# Altium PCB S7CAS-PLEIADES-CARTE-MERE_P01.PcbDoc (part 1 of 9)
Units mil, origin at the board's own origin, x right, y up, seen from the top; angles counter-clockwise.
Board outline 6153 x 3696 mil, 16 copper layers (Top, Ground Plane 1, Signal Layer 1, Ground Plane 2, Signal Layer 2, Ground Plane 3, Power Plane, Ground Plane 4, Ground Plane 5, Power Plane 2, Ground Plane 6, Signal Layer 3, Ground Plane 7, Signal Layer 4, Ground Plane 8, Bottom), stack 75.282 mil thick; 430 components, 328 nets, 2174 pads, 2158 vias.
Unrouted connection lines stored in the file: 202.
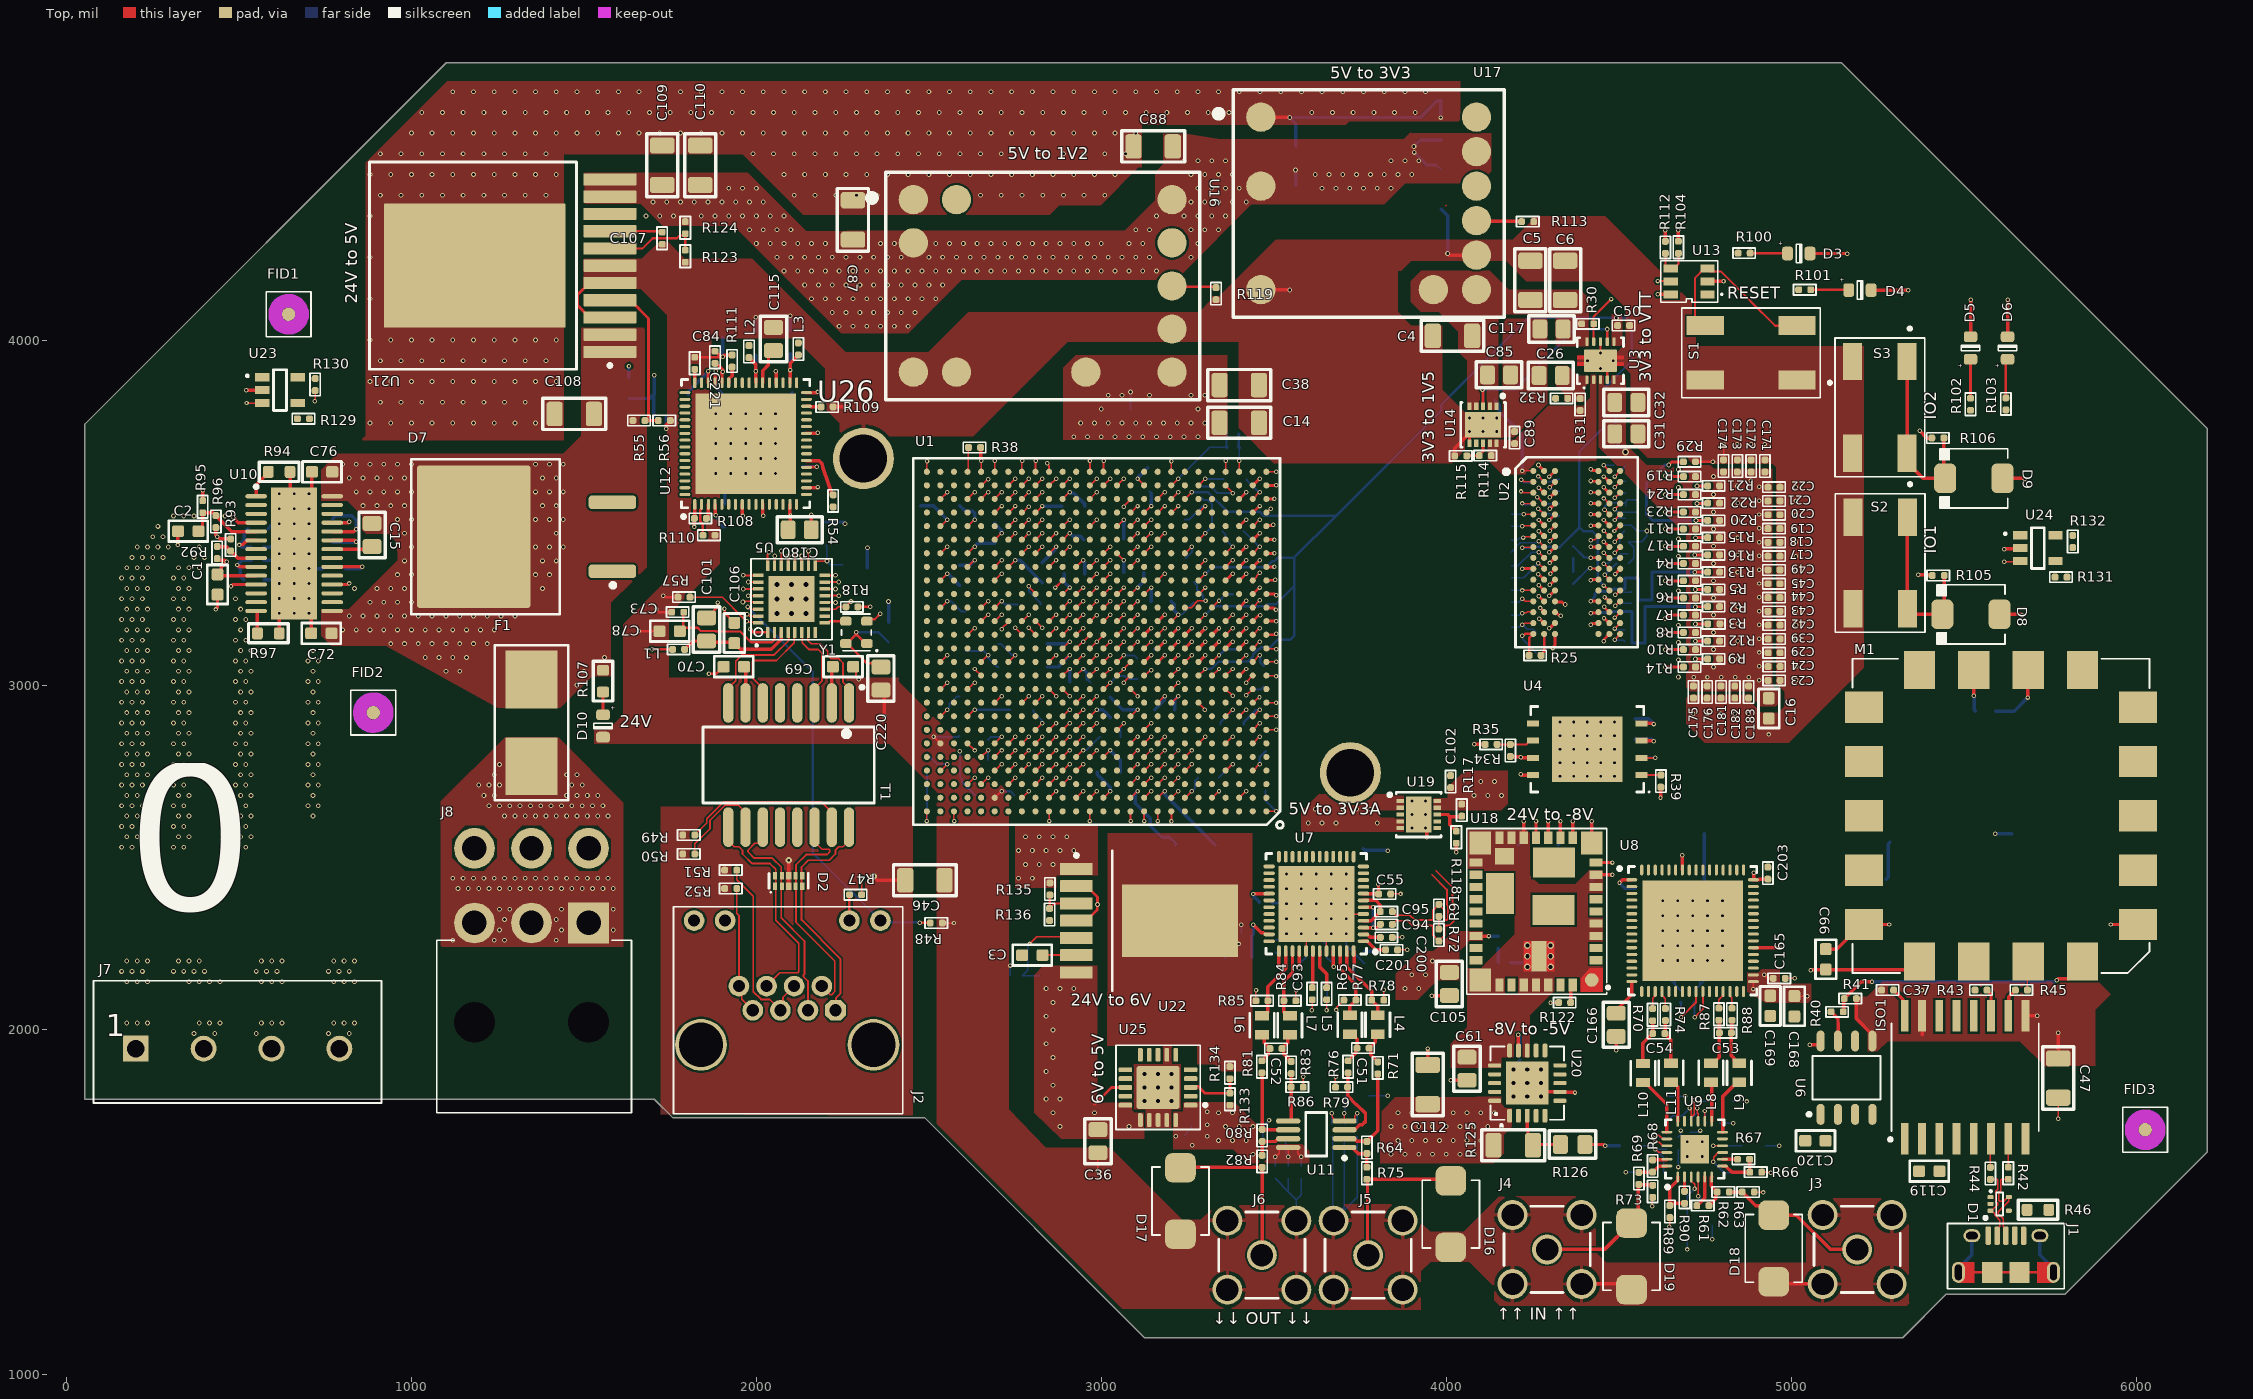
[diagram p0: Top view]
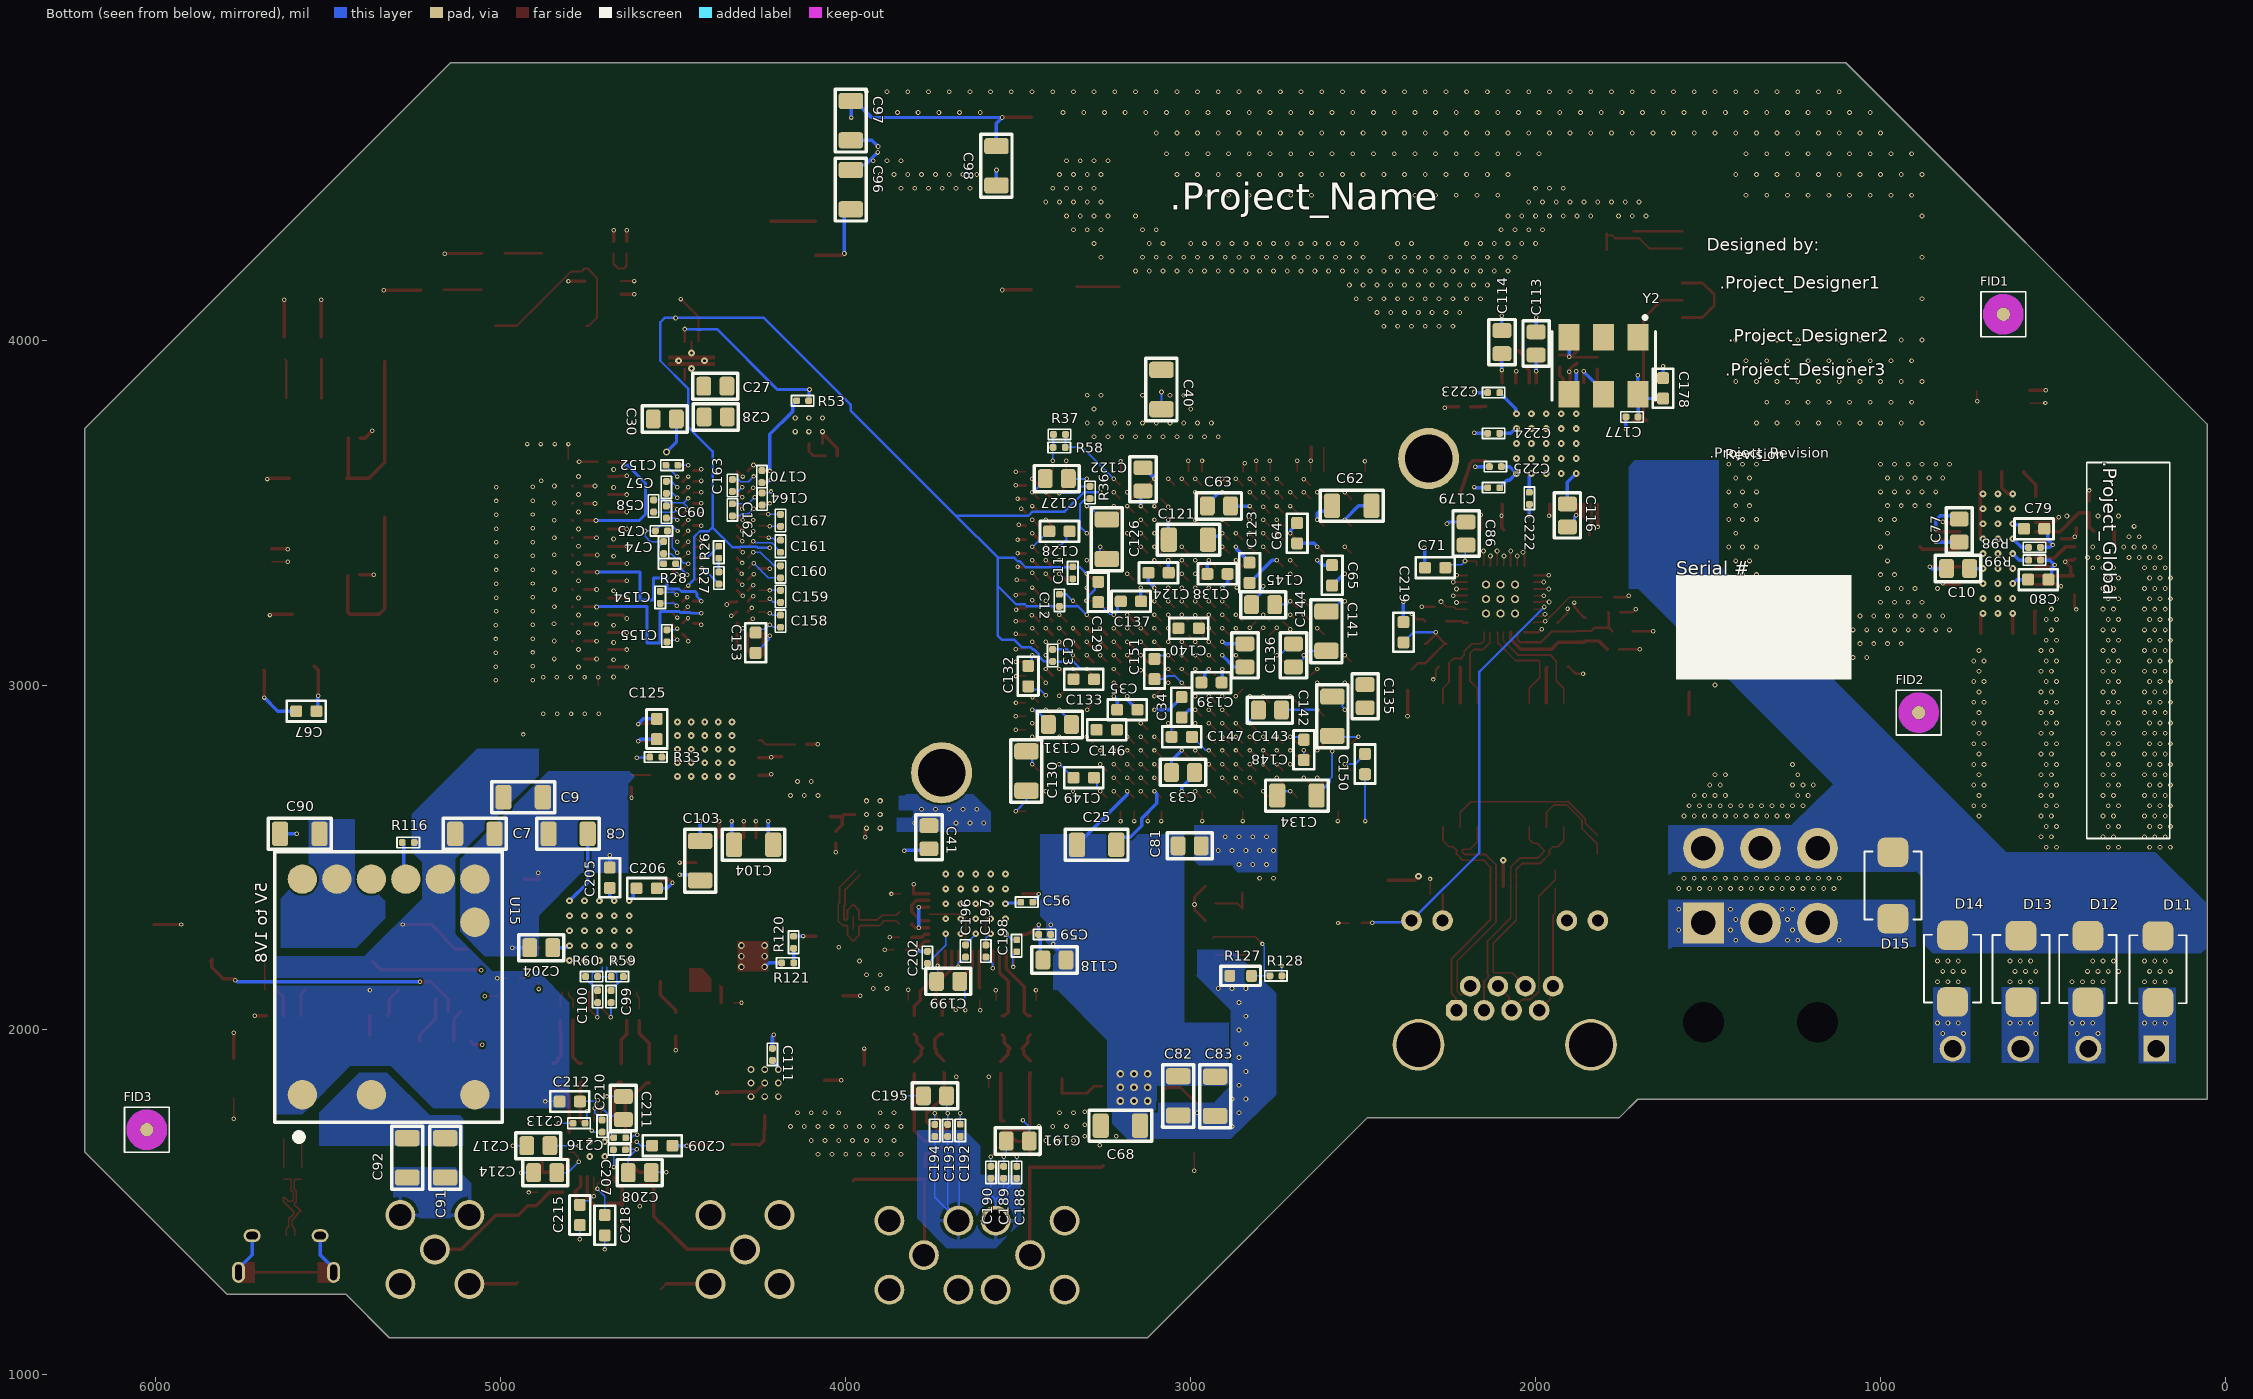
[diagram p1: Bottom view, seen from below]
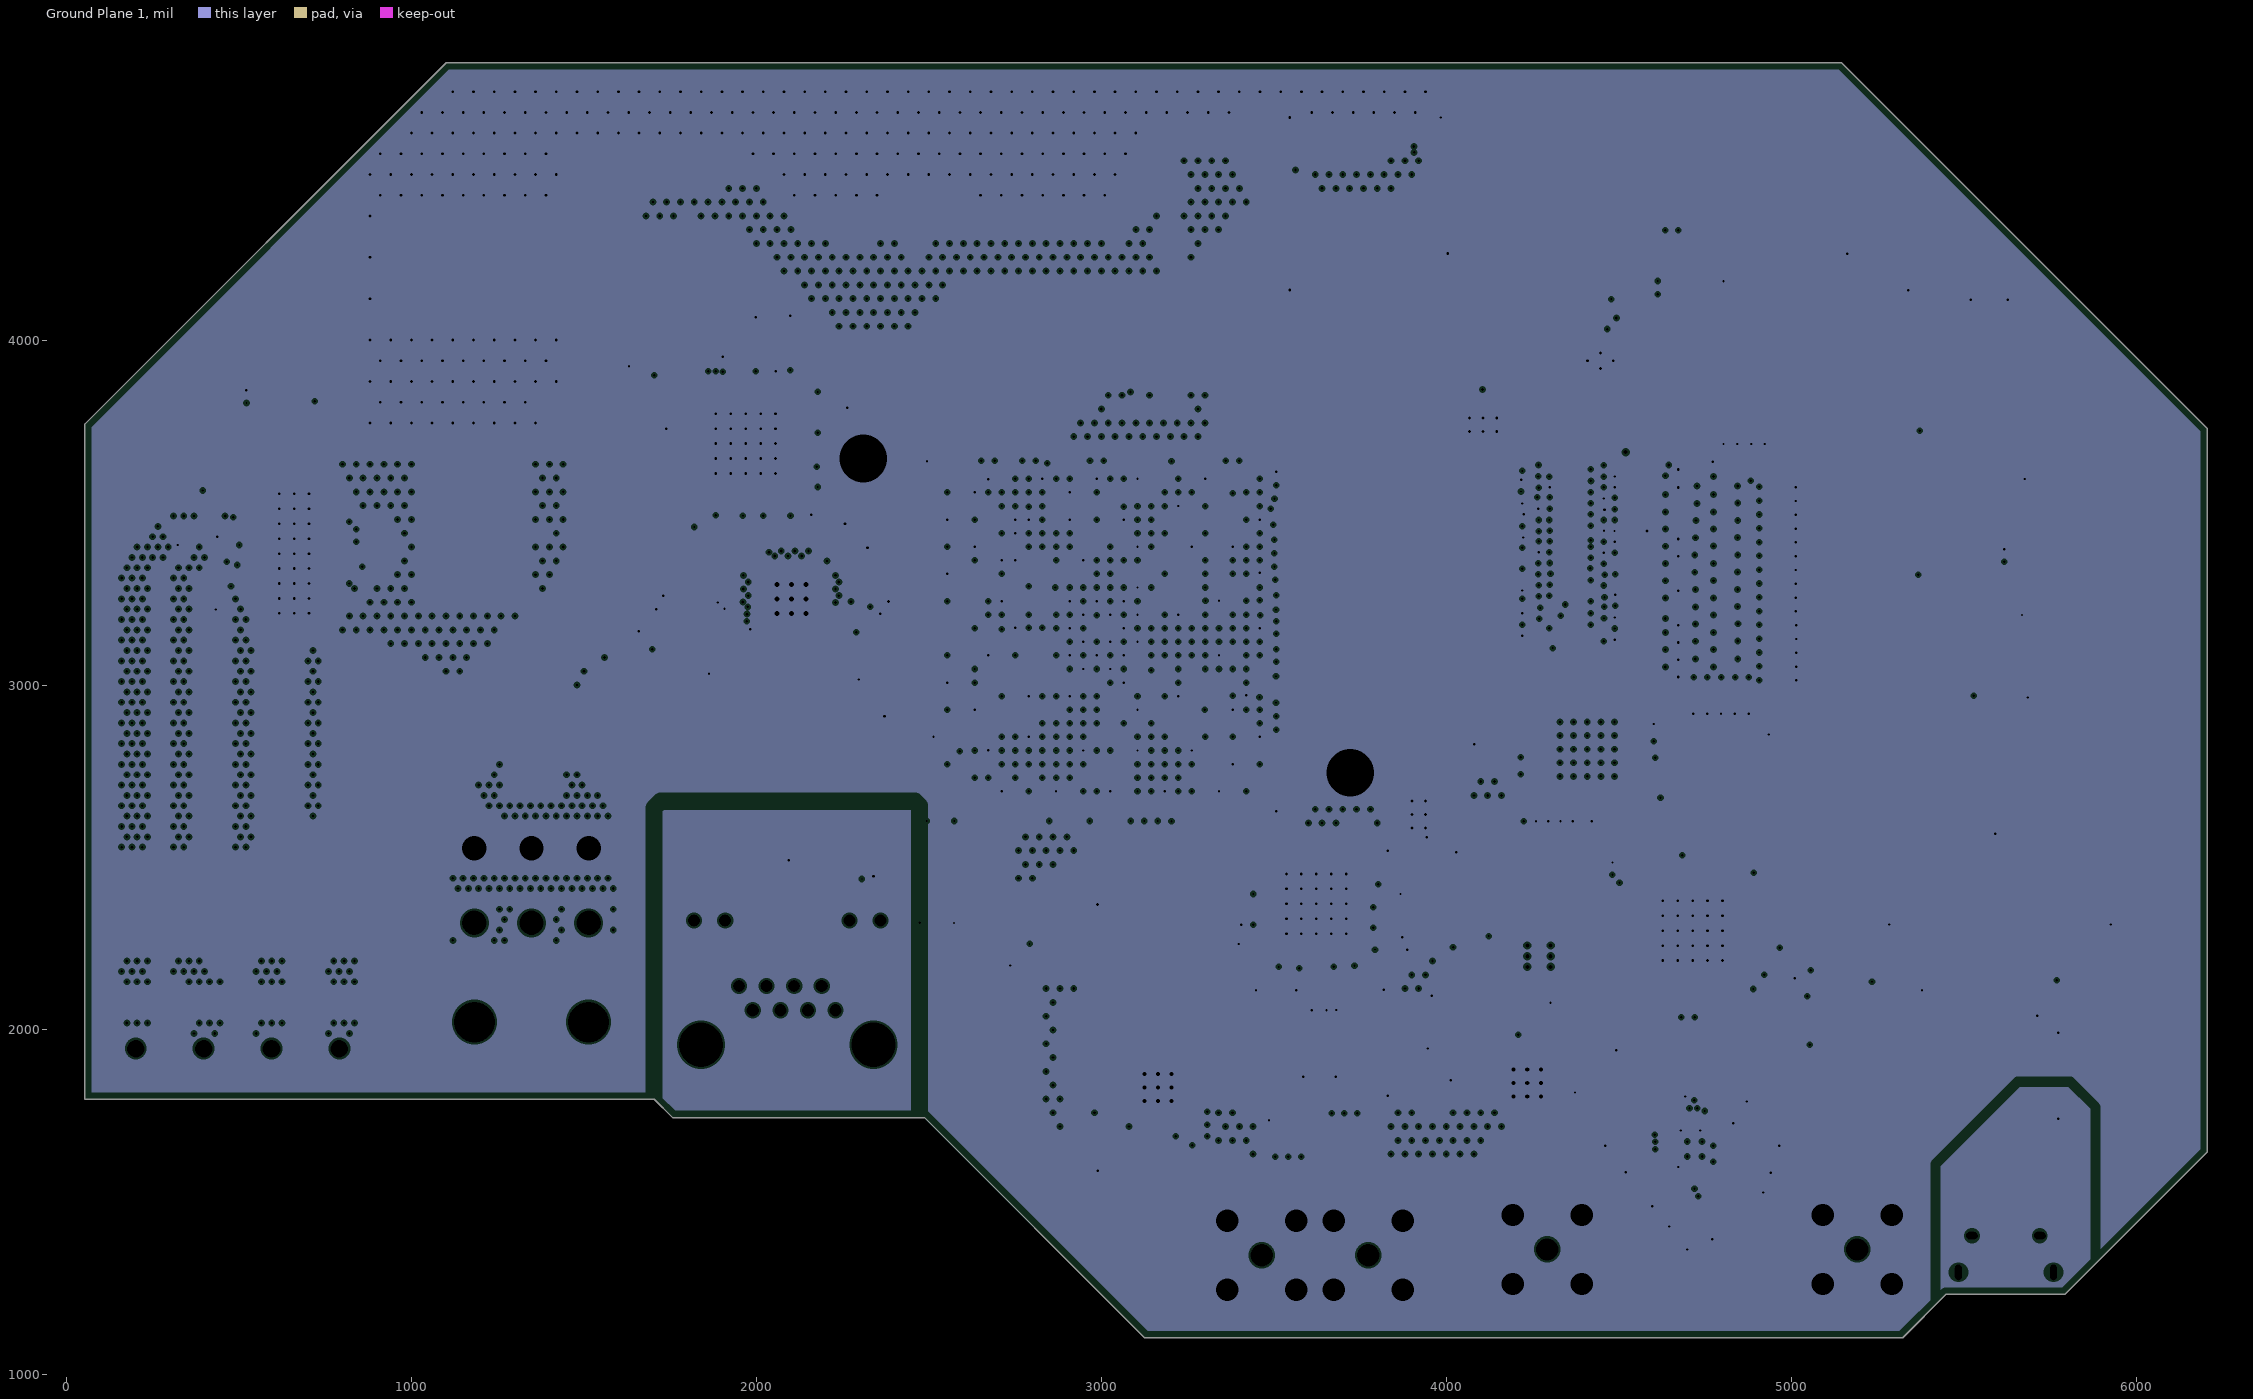
[diagram p2: Ground Plane 1, clearances drawn from the general rule]
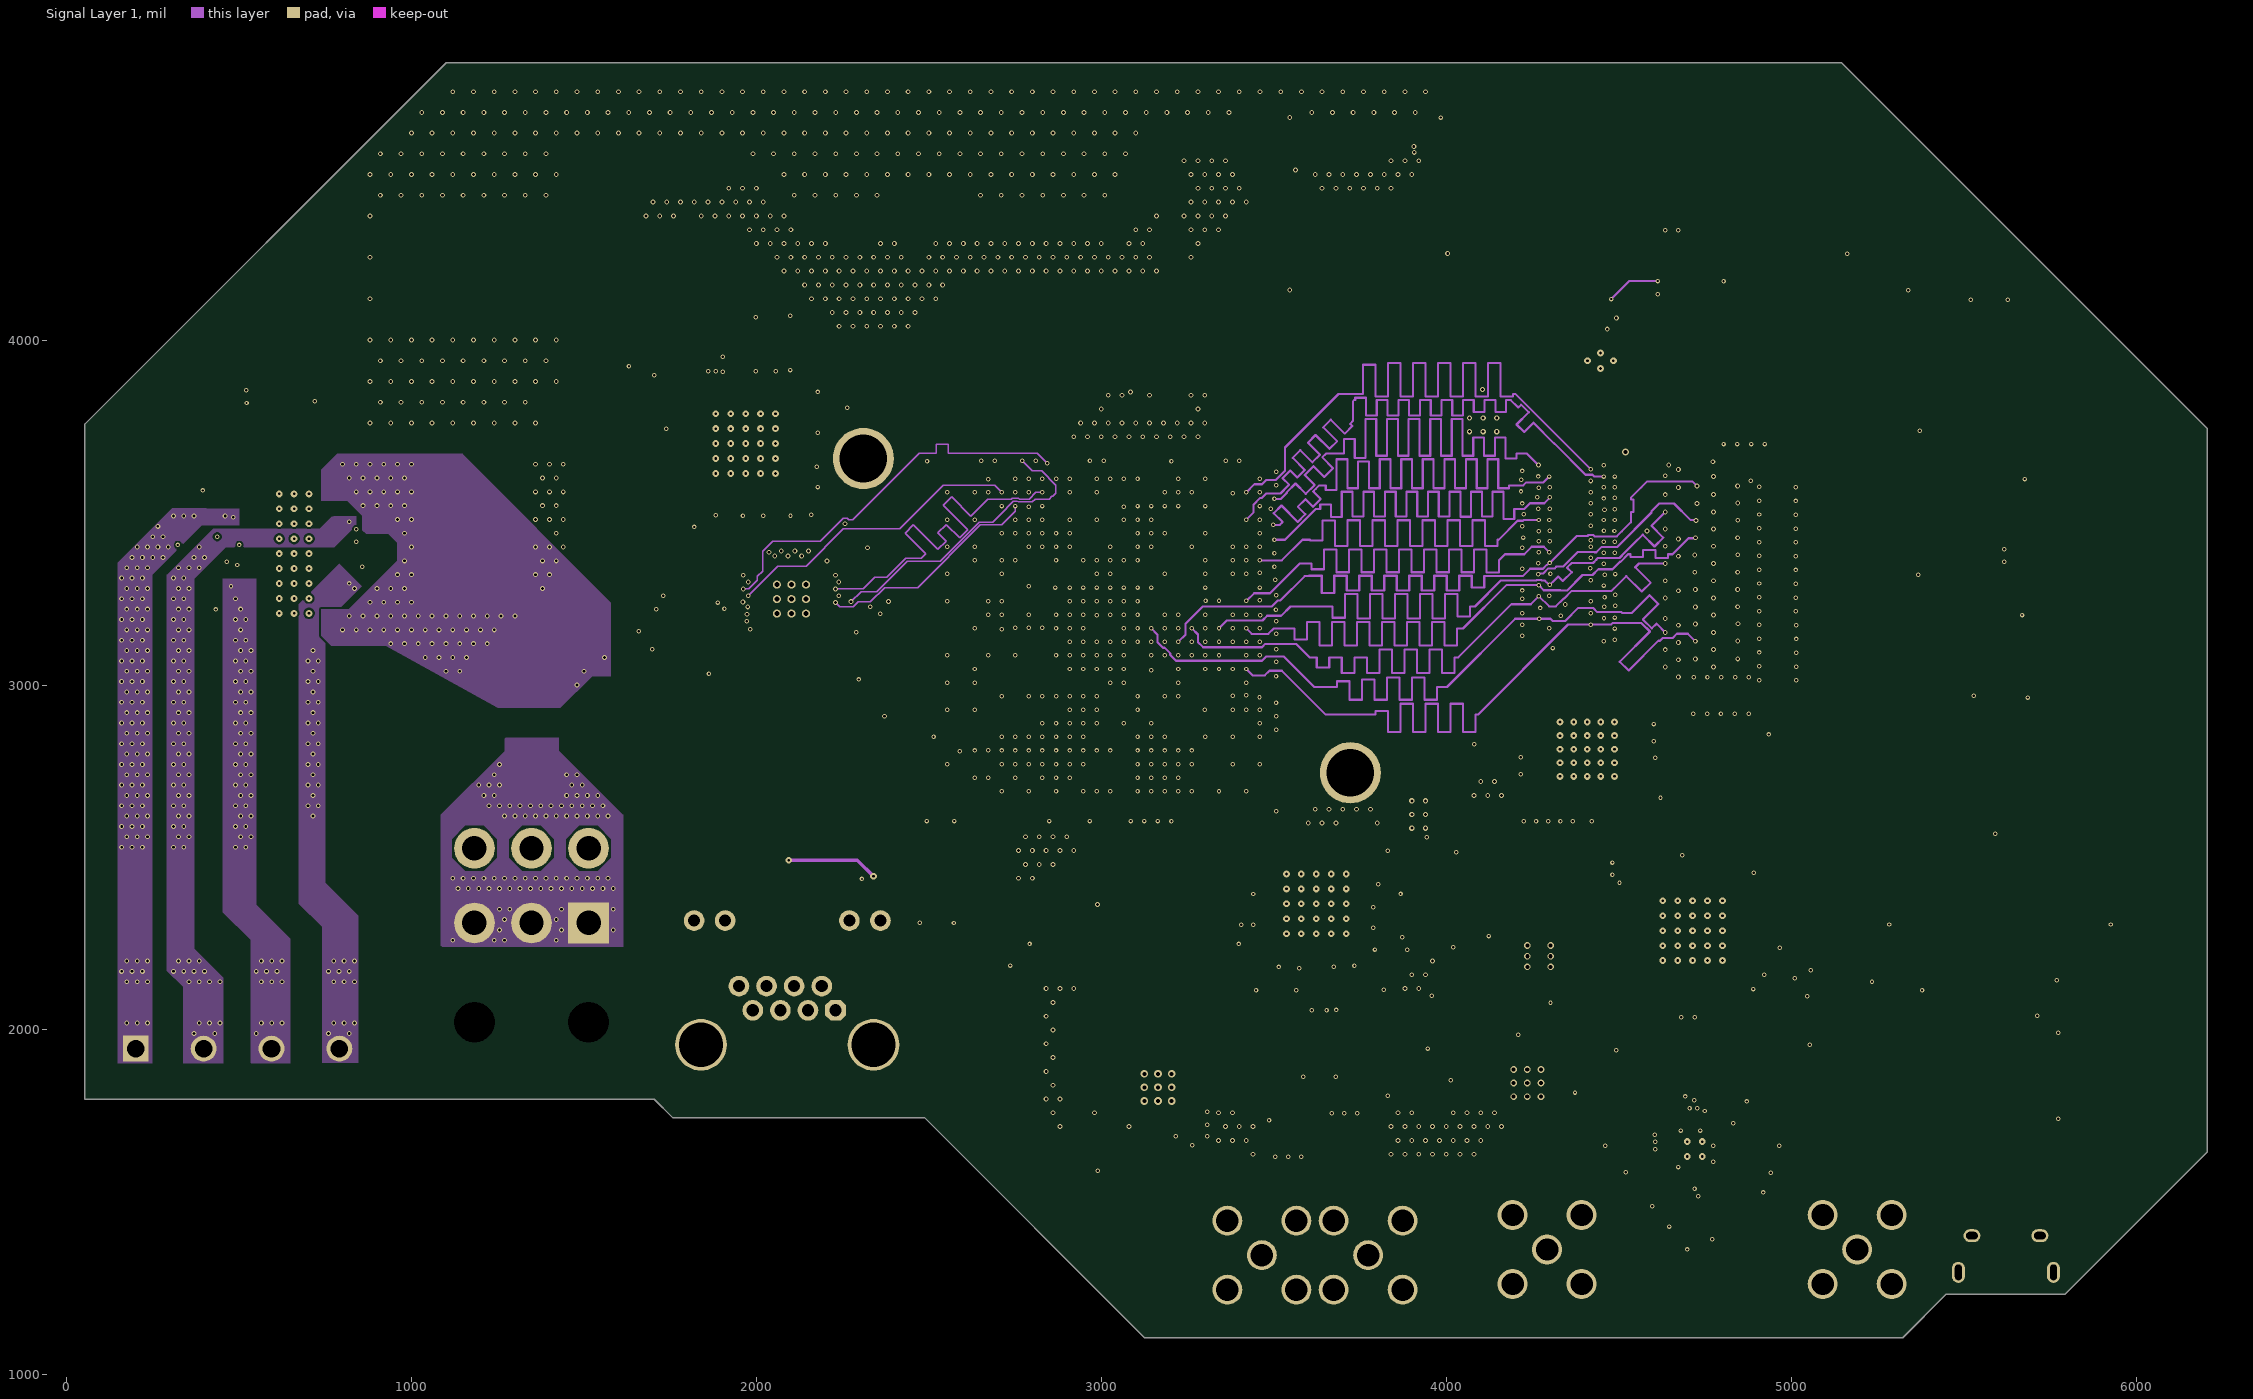
[diagram p3: Signal Layer 1]
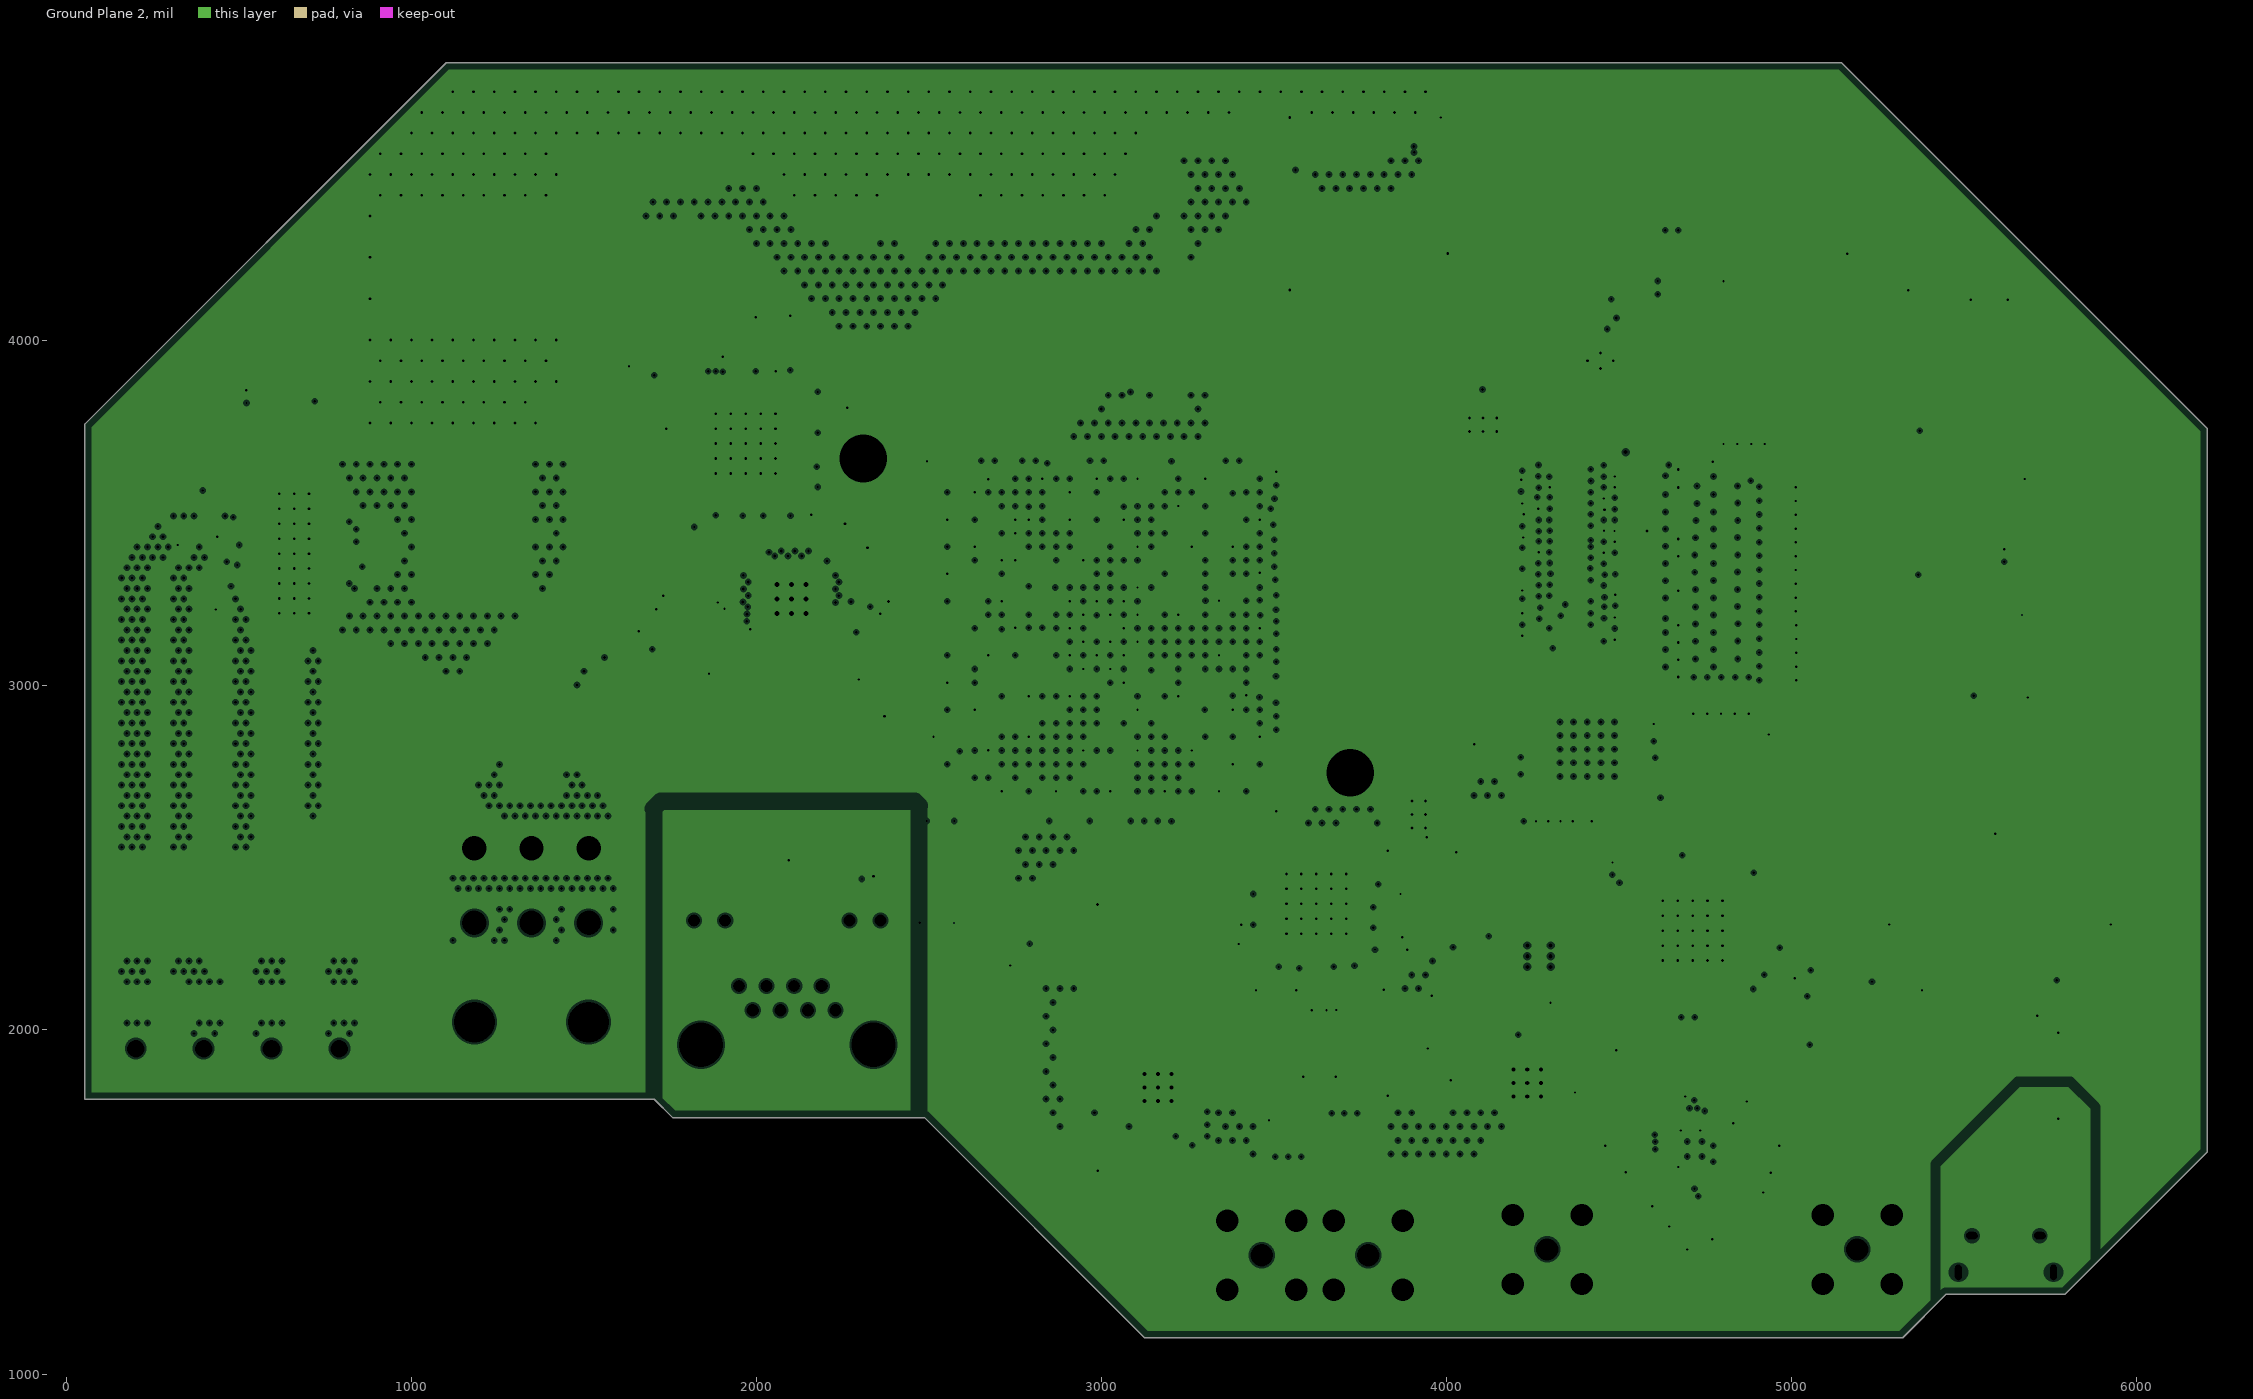
[diagram p4: Ground Plane 2, clearances drawn from the general rule]
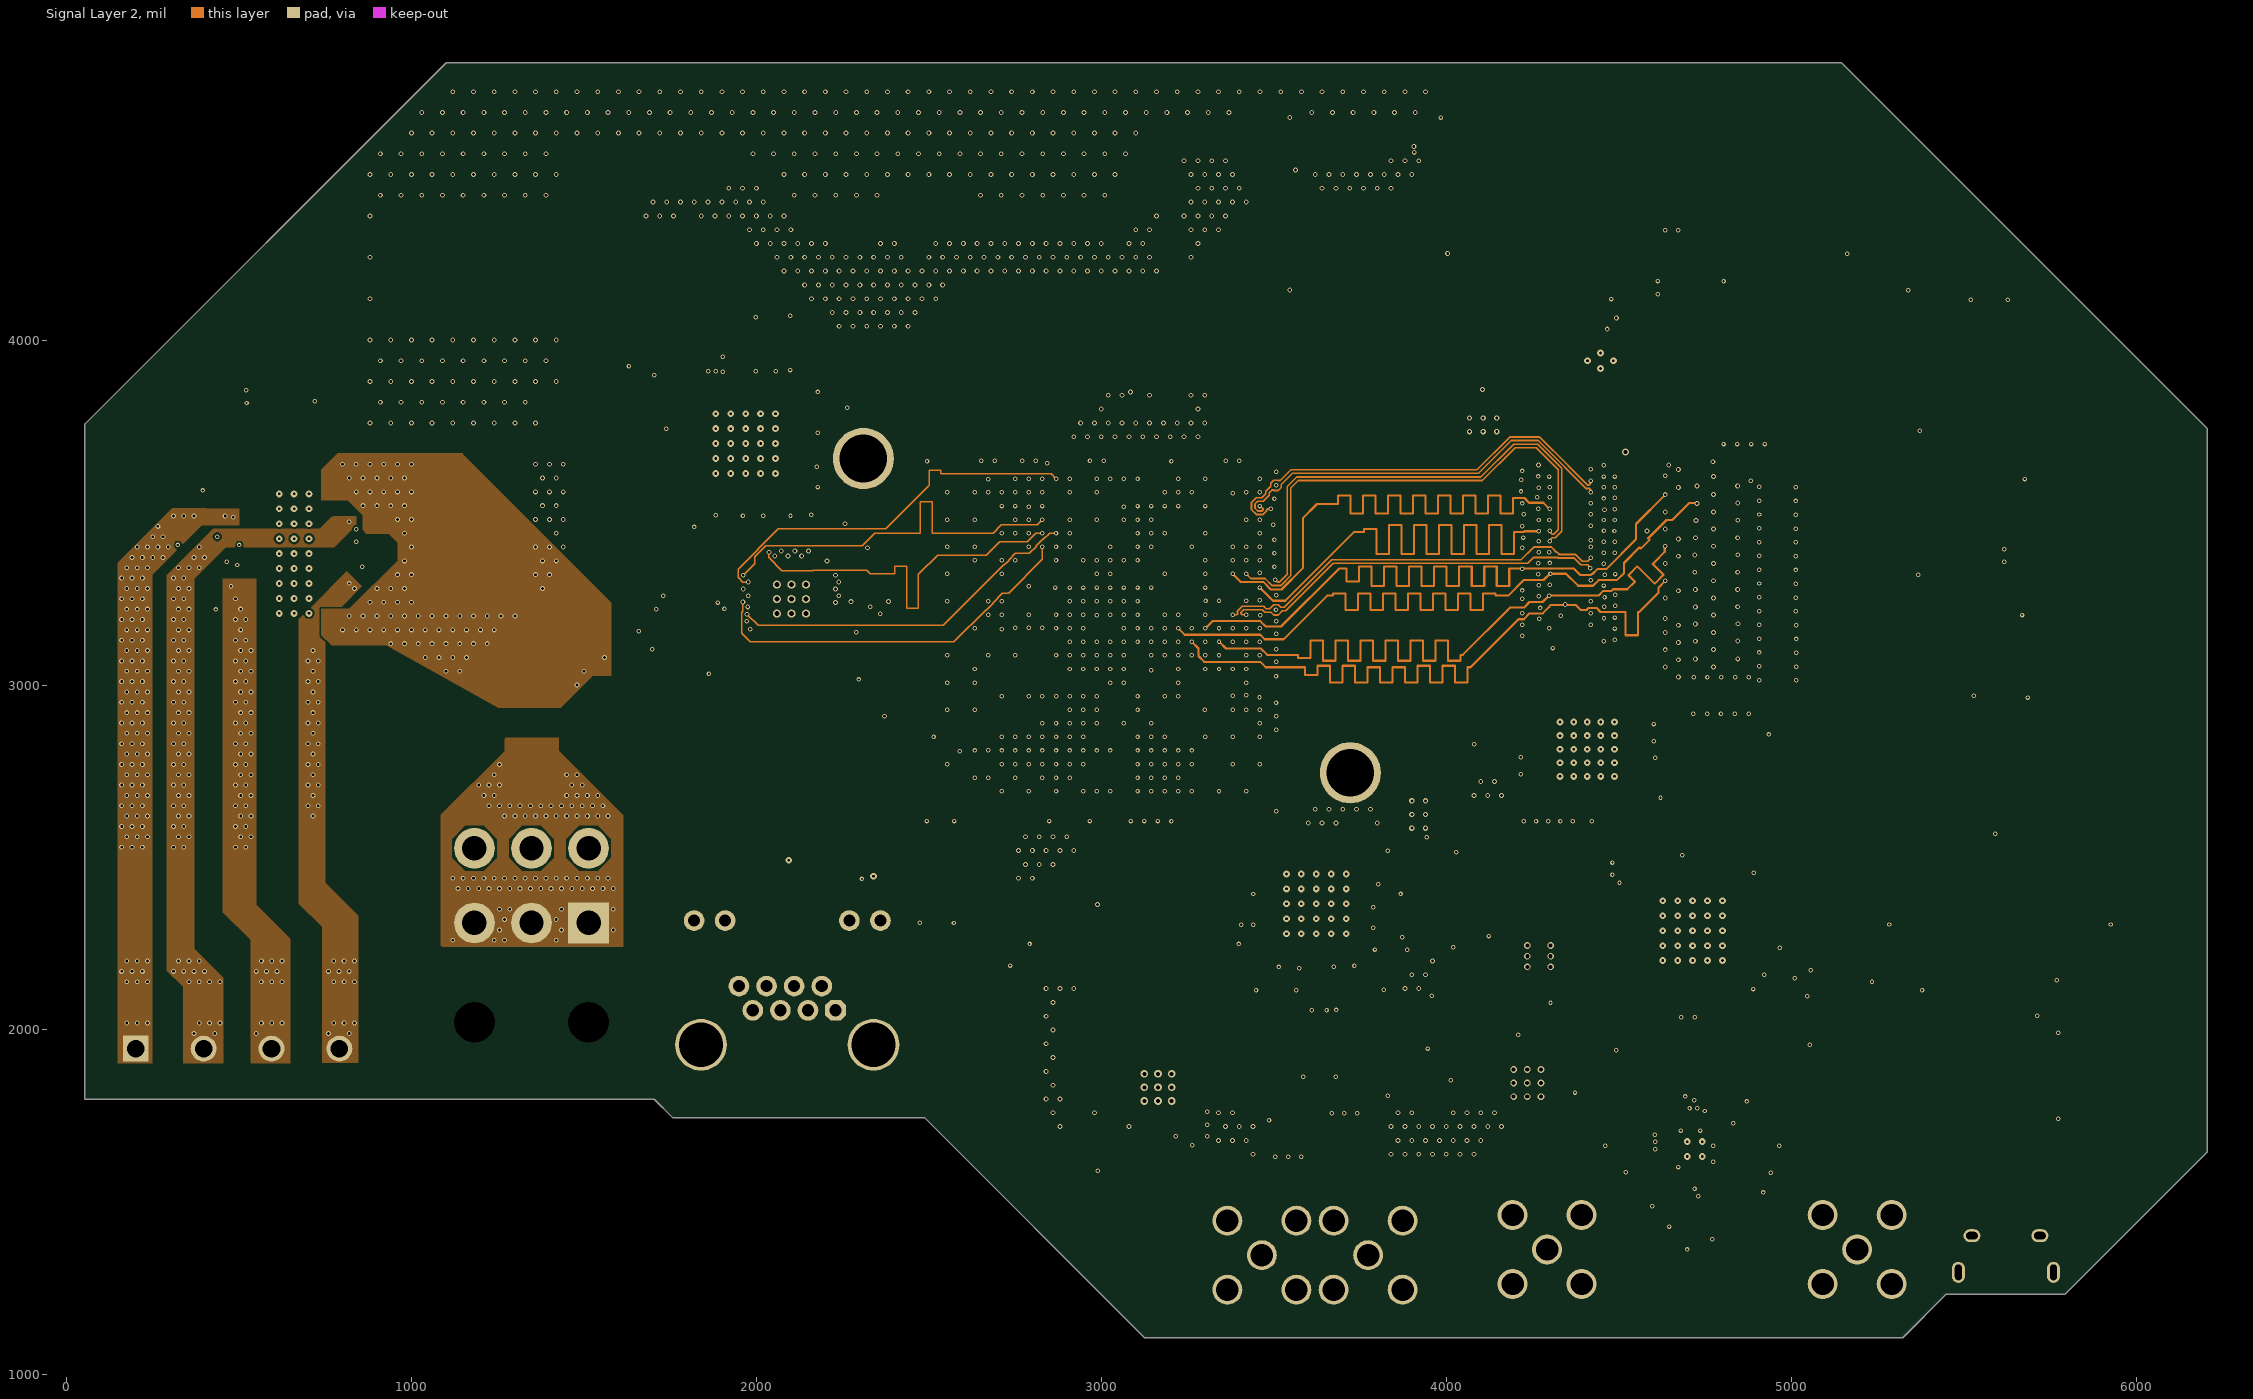
[diagram p5: Signal Layer 2]
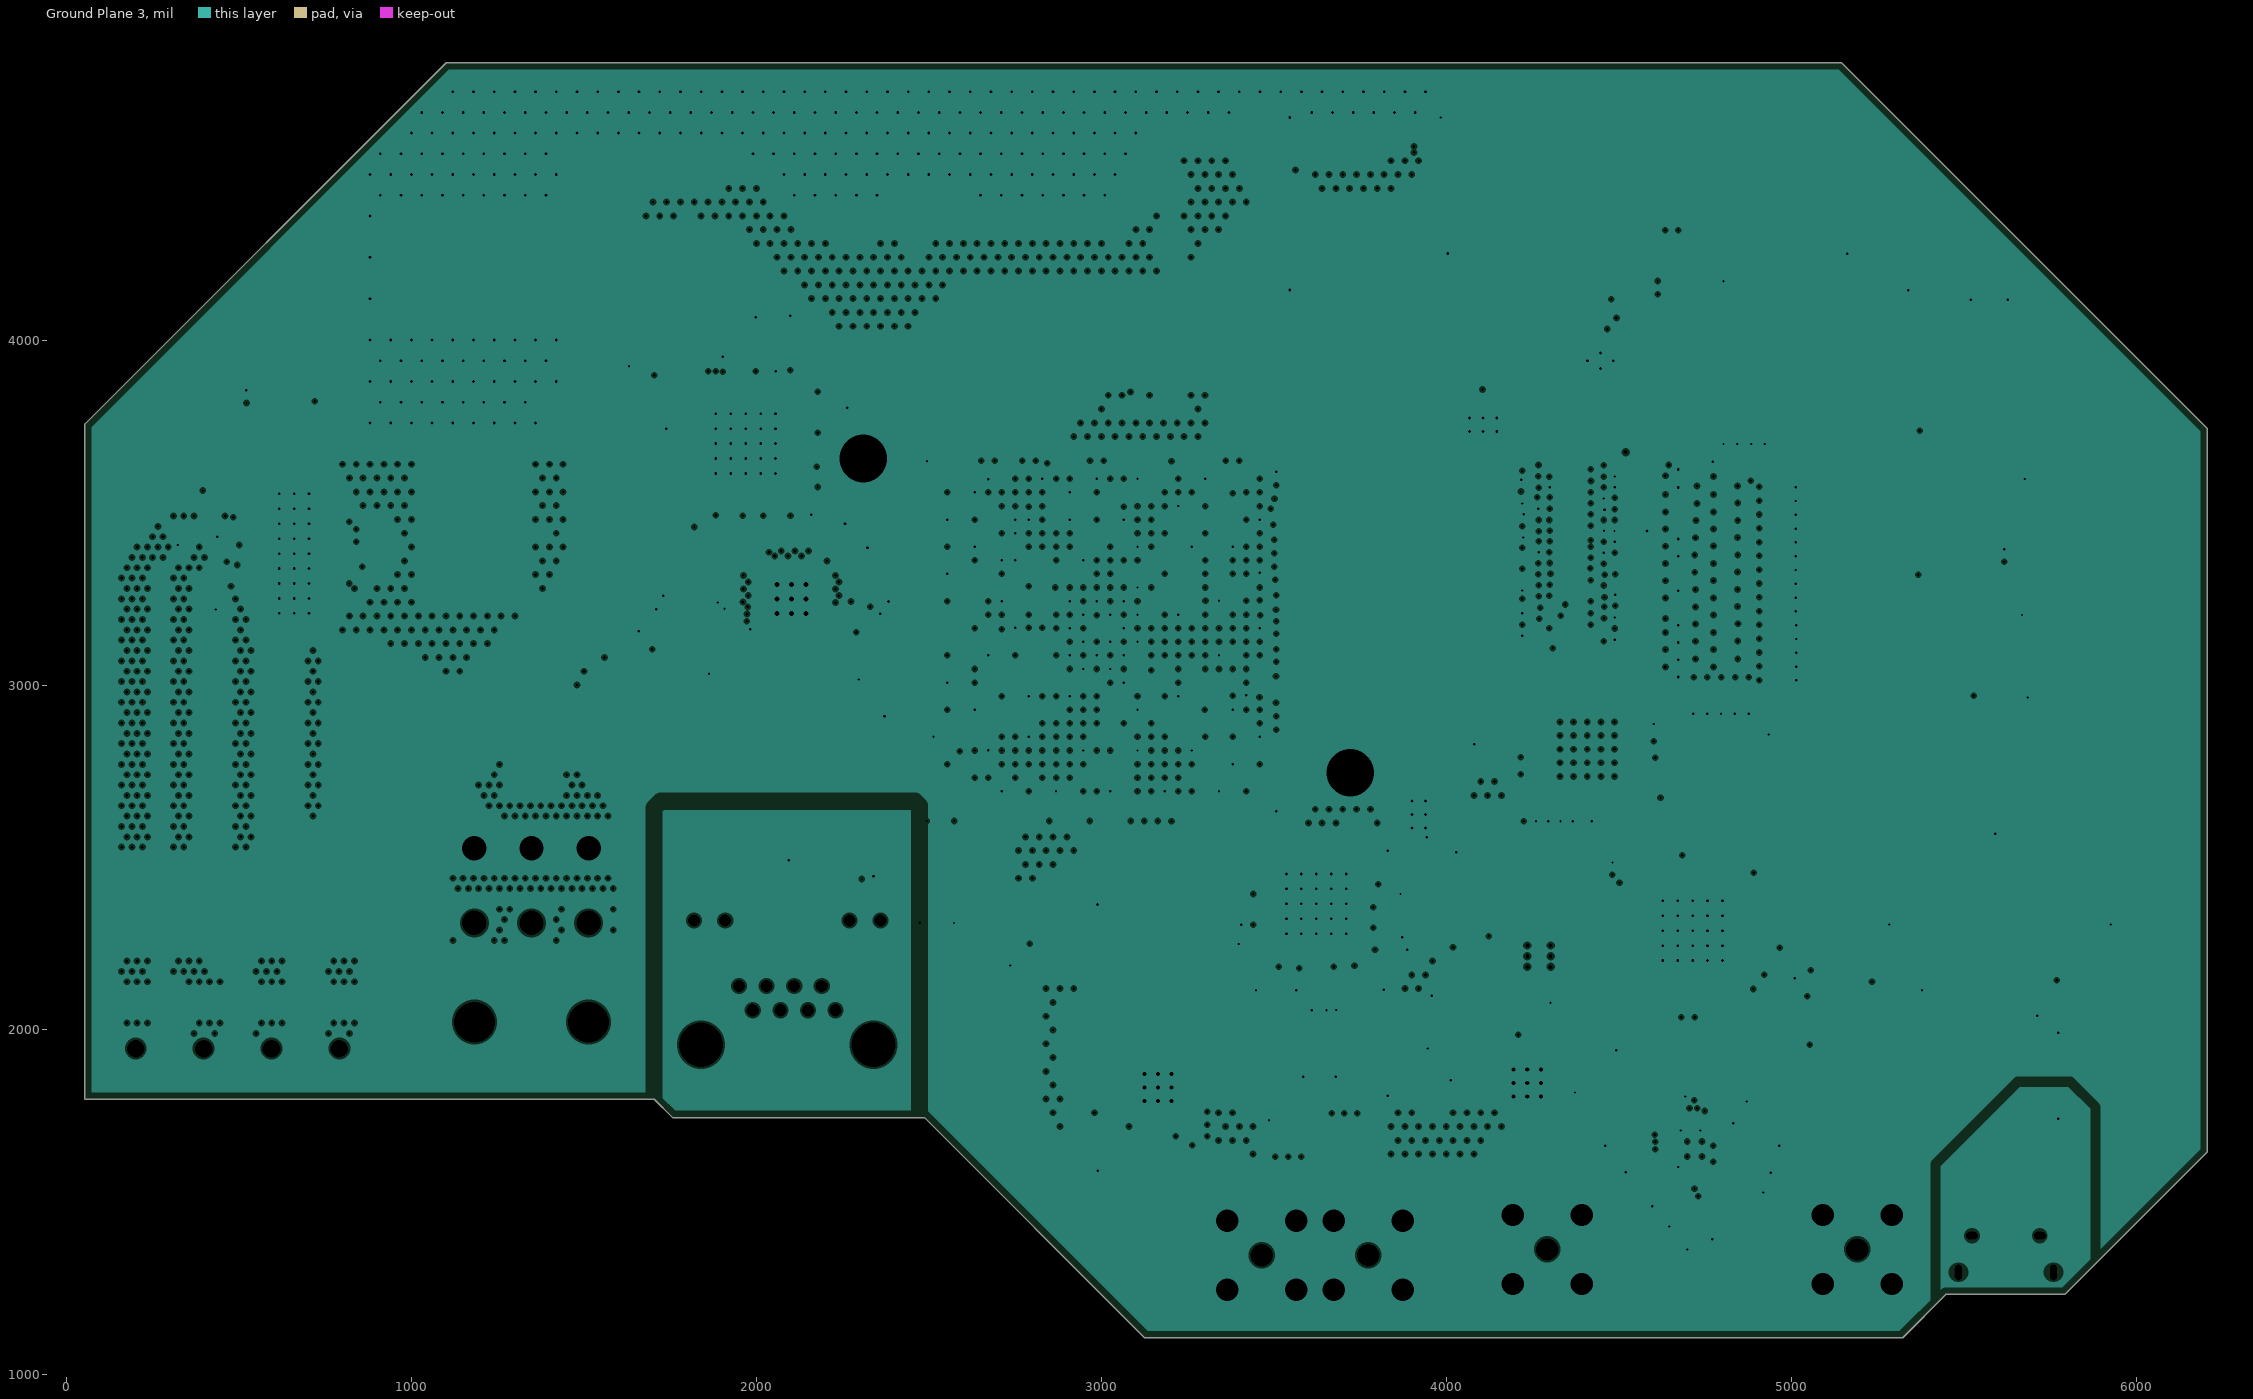
[diagram p6: Ground Plane 3, clearances drawn from the general rule]
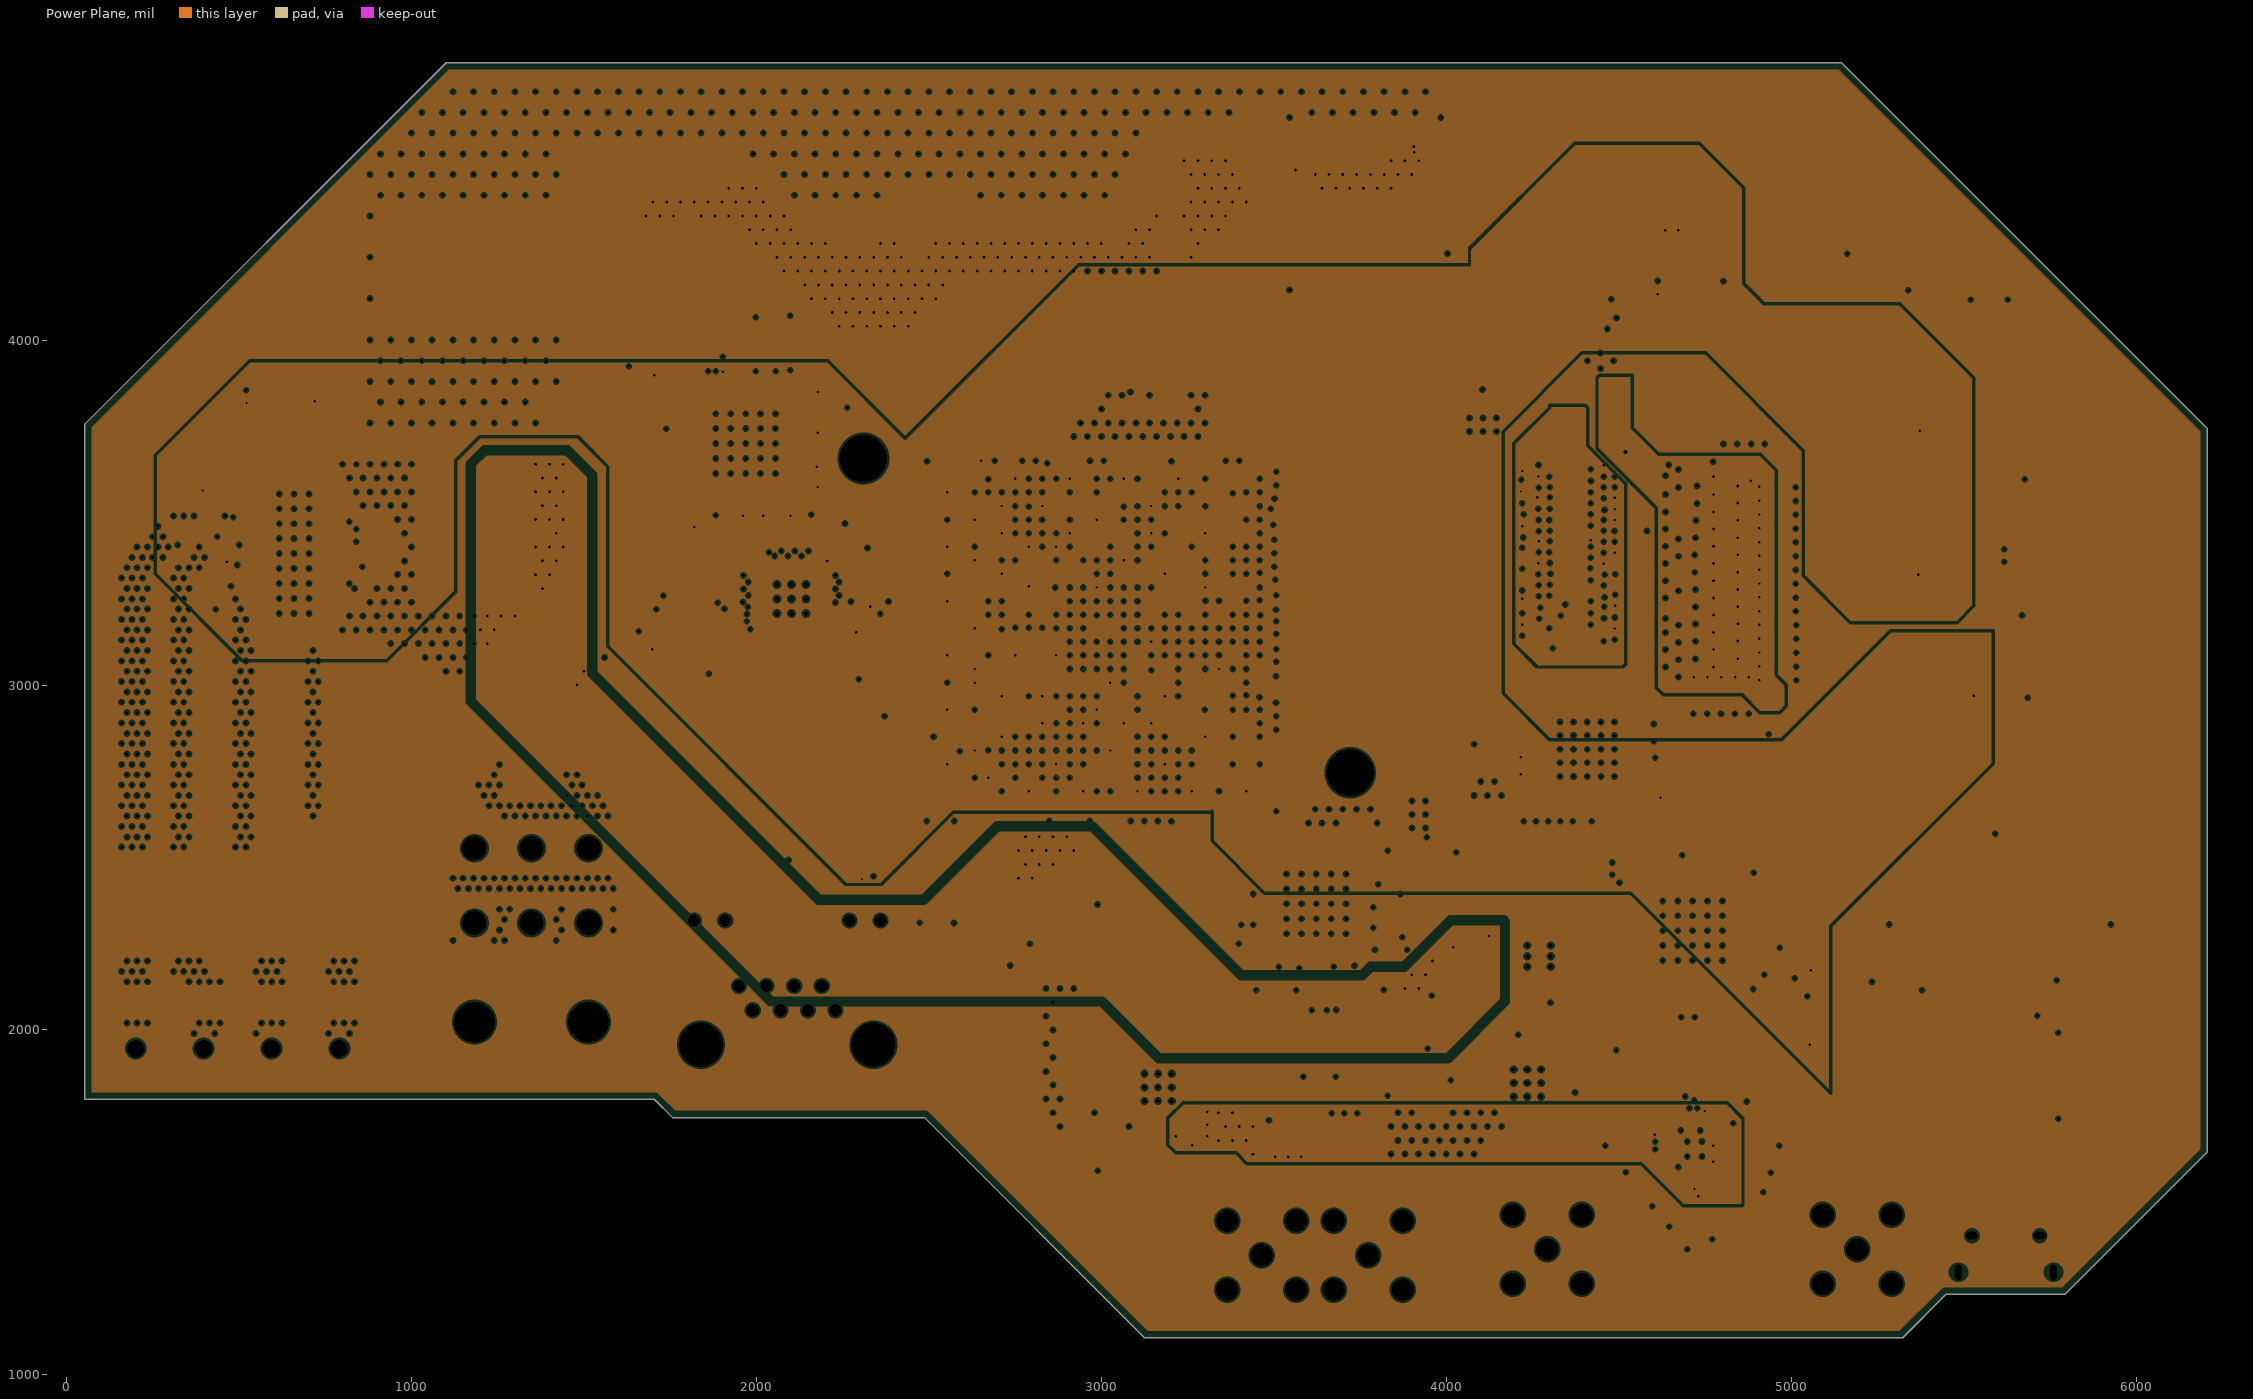
[diagram p7: Power Plane, clearances drawn from the general rule]
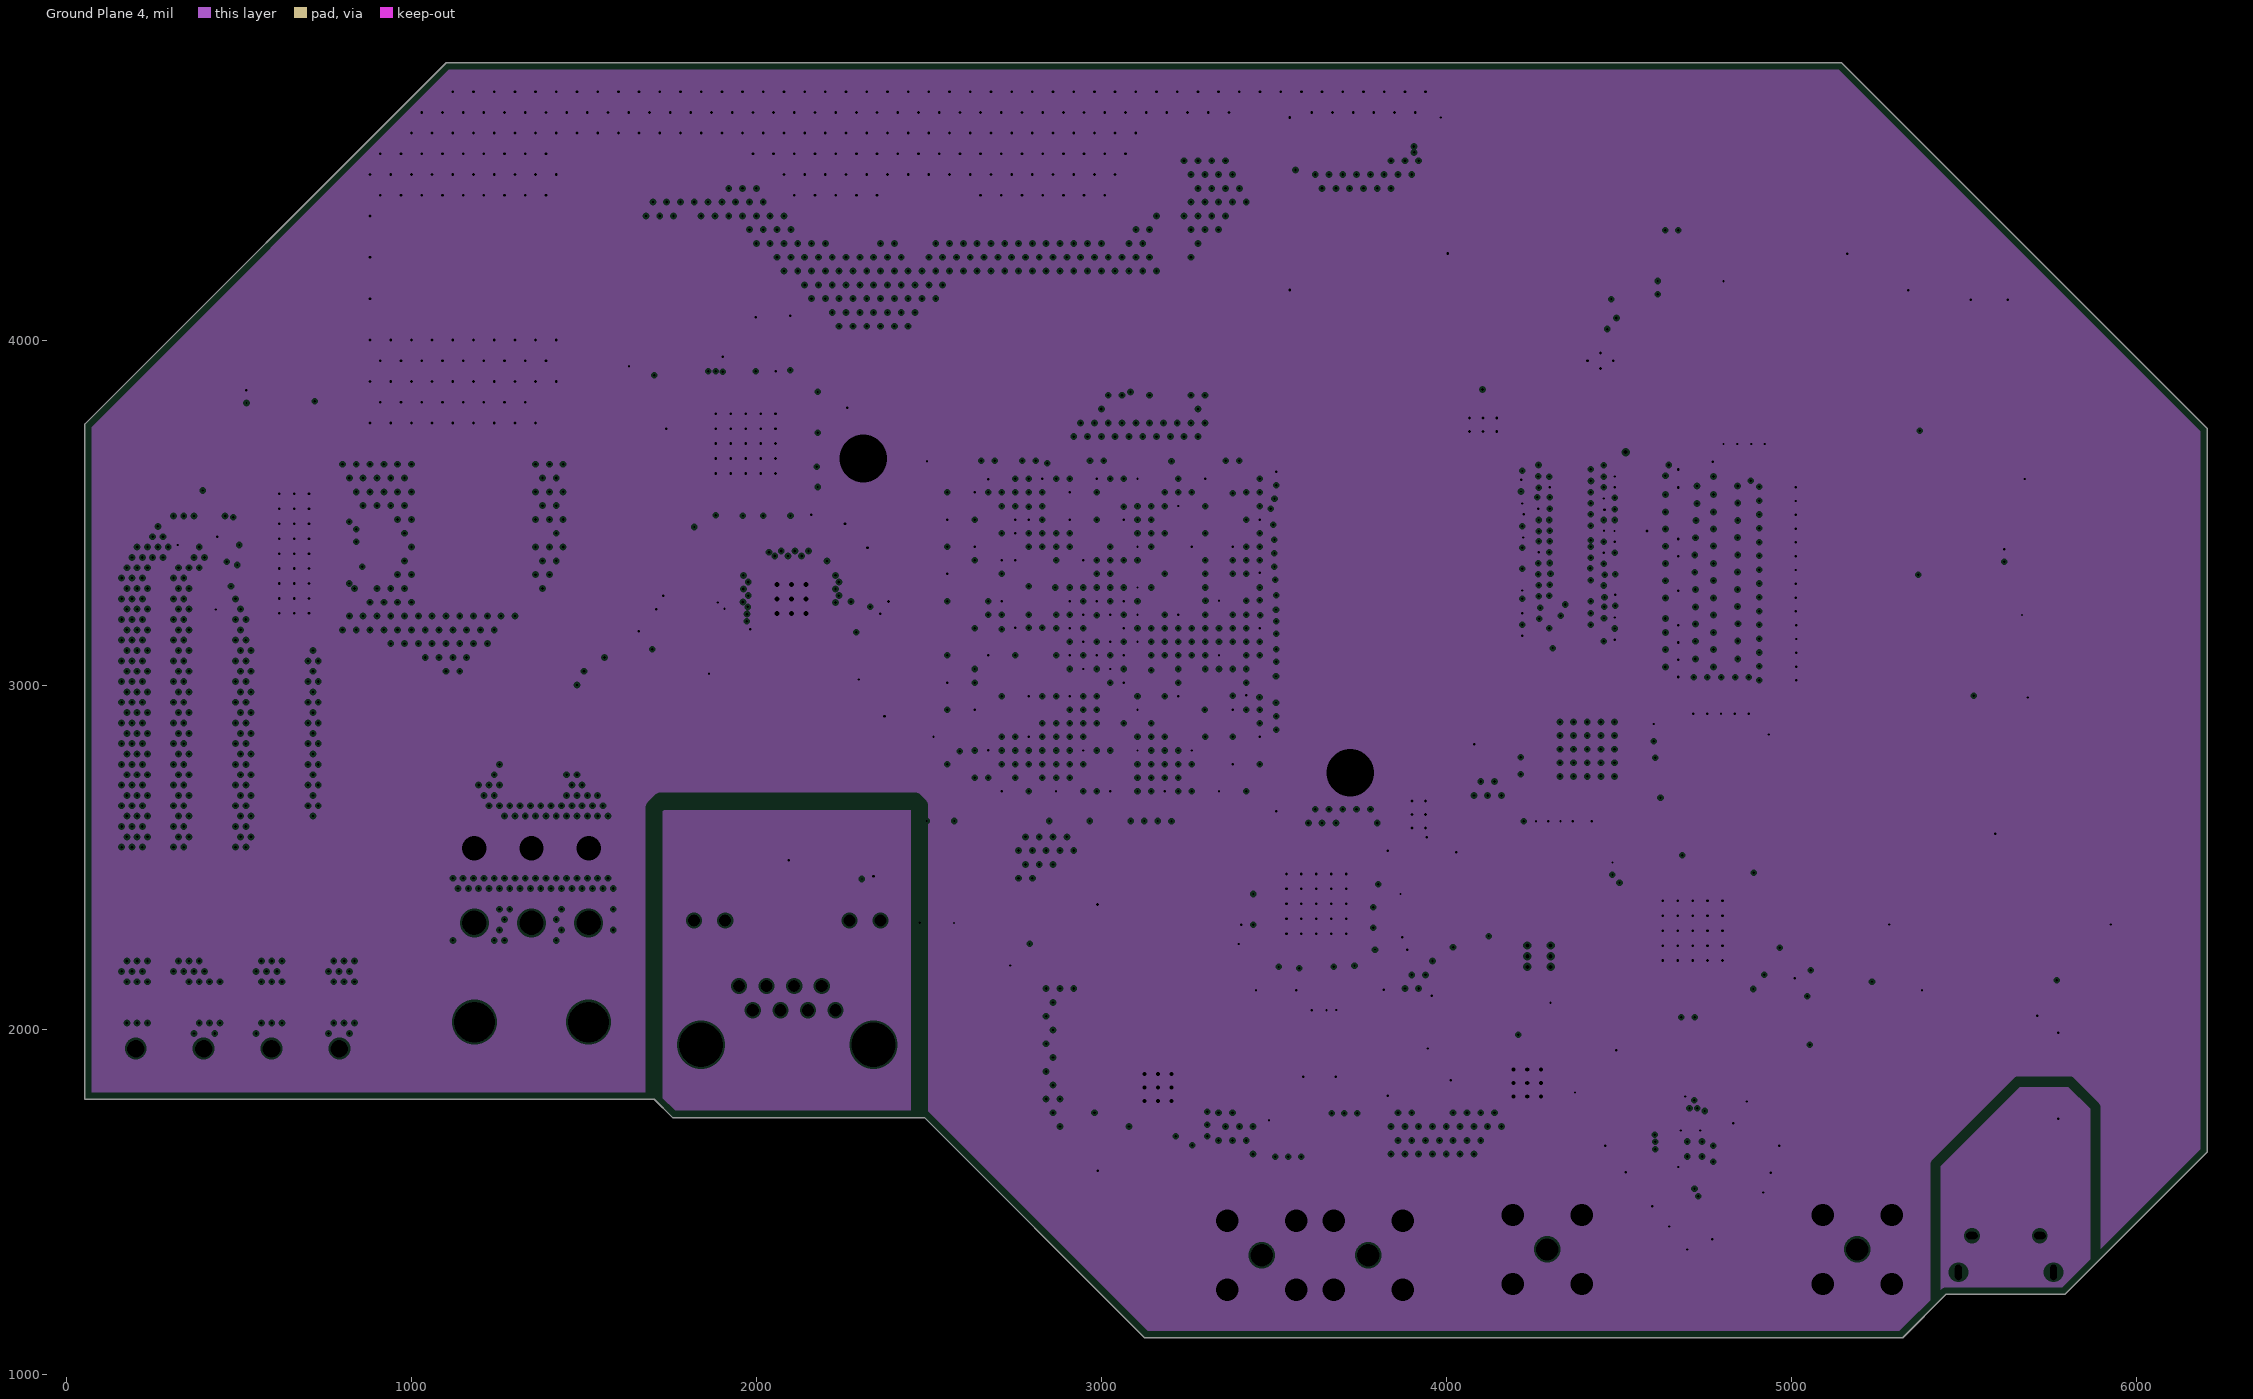
[diagram p8: Ground Plane 4, clearances drawn from the general rule]
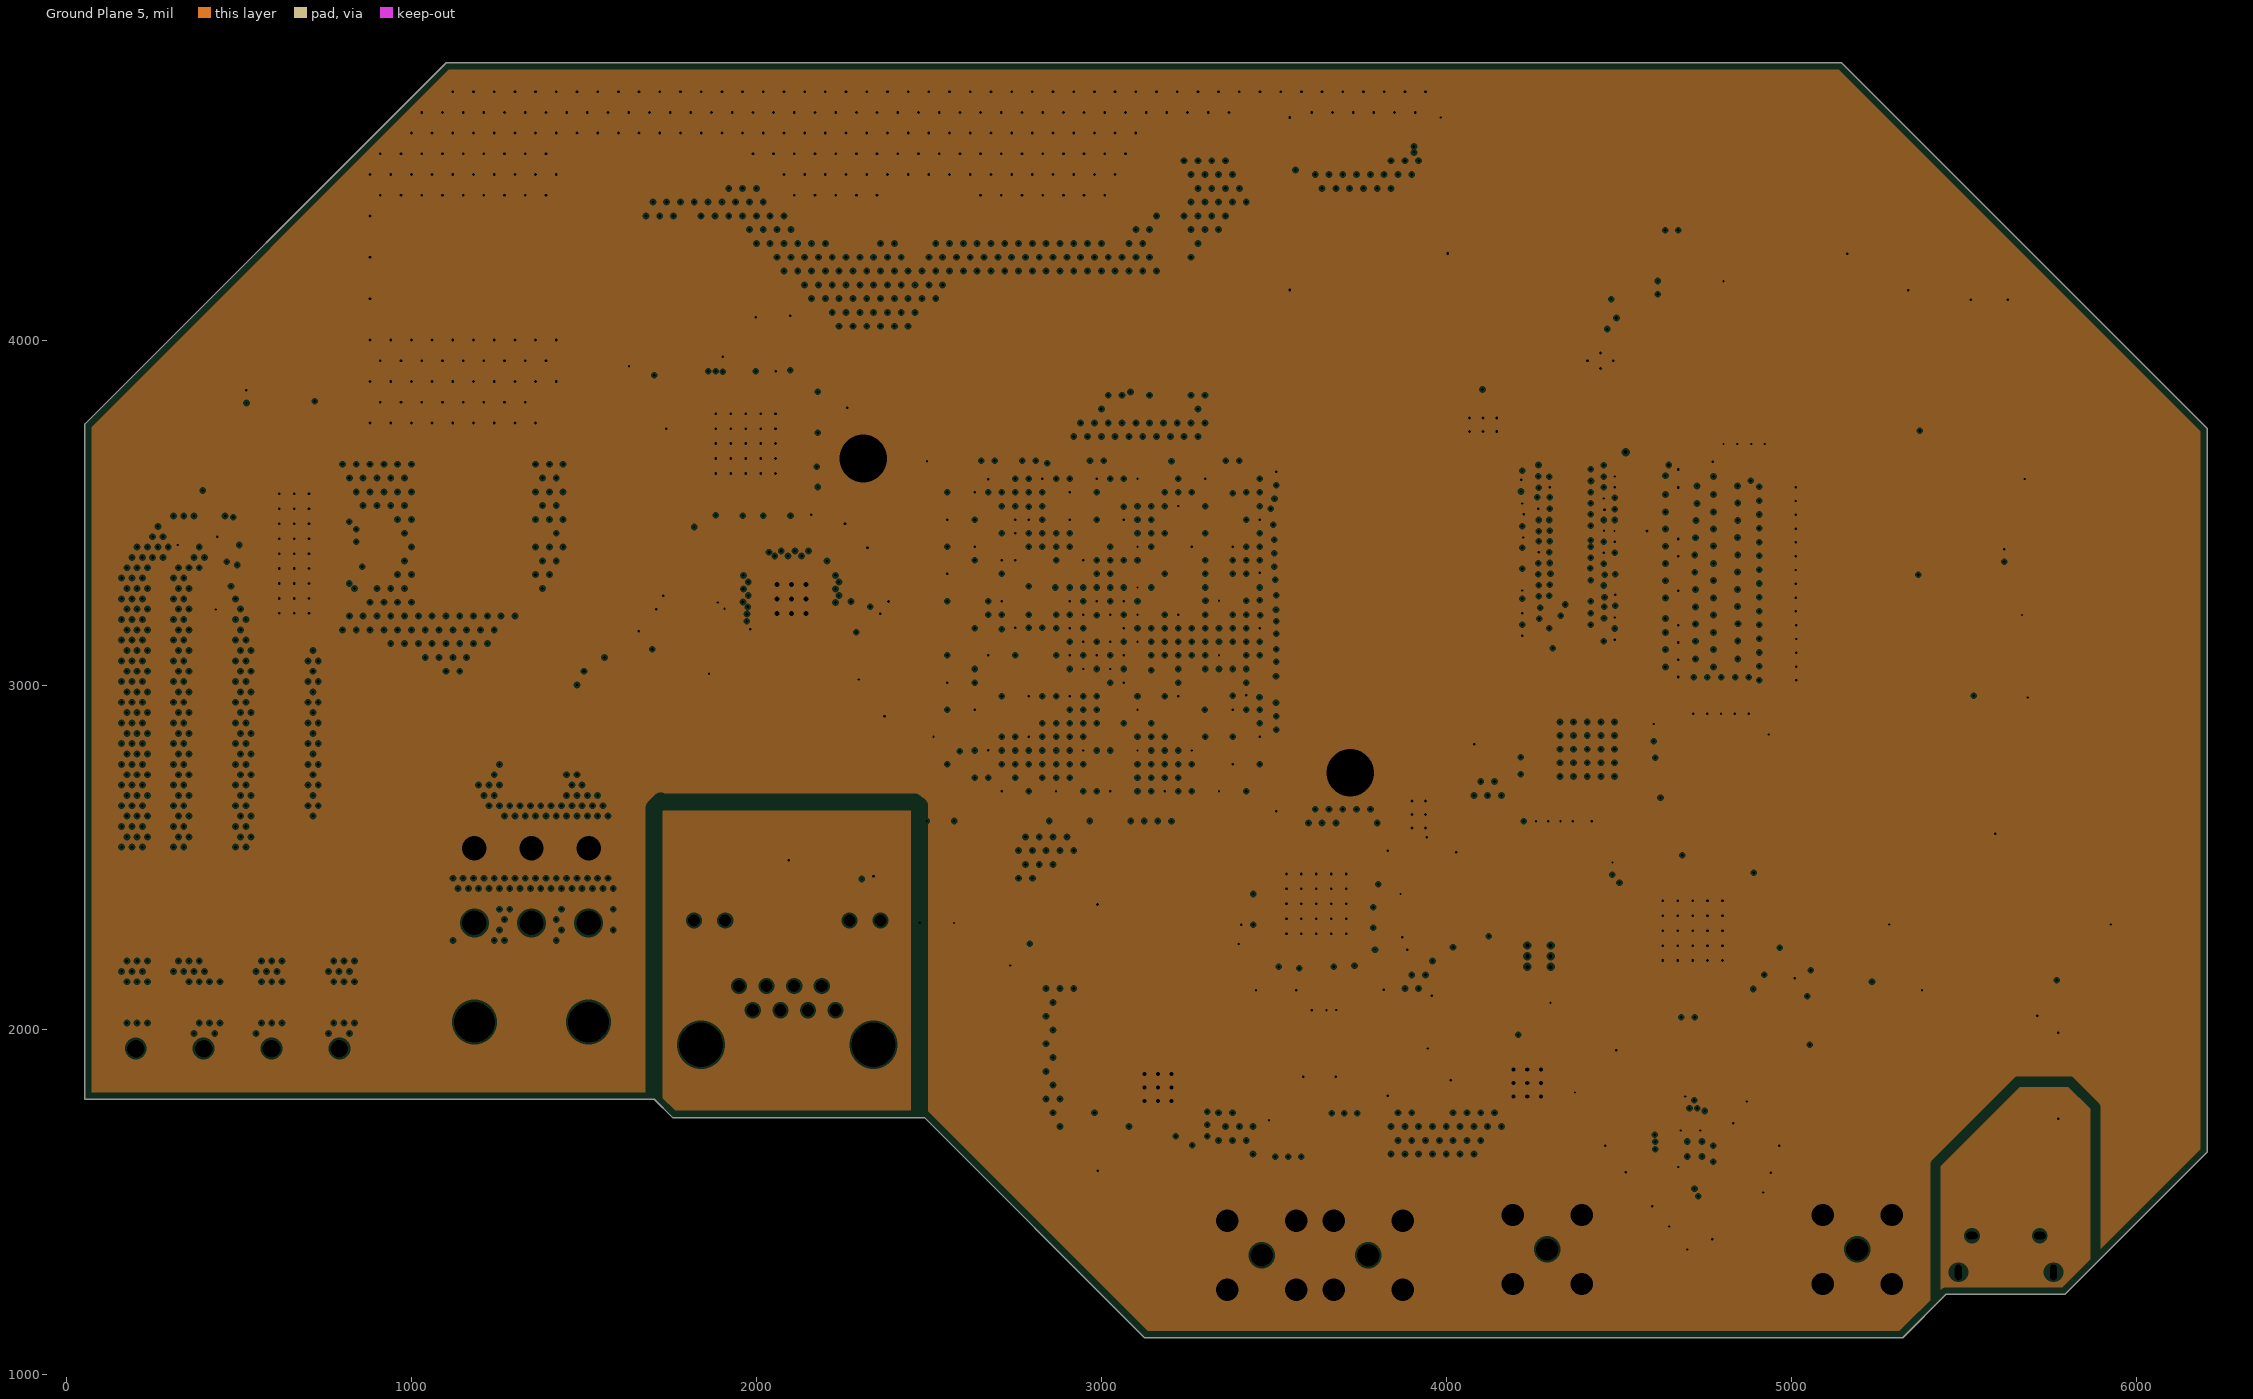
[diagram p9: Ground Plane 5, clearances drawn from the general rule]
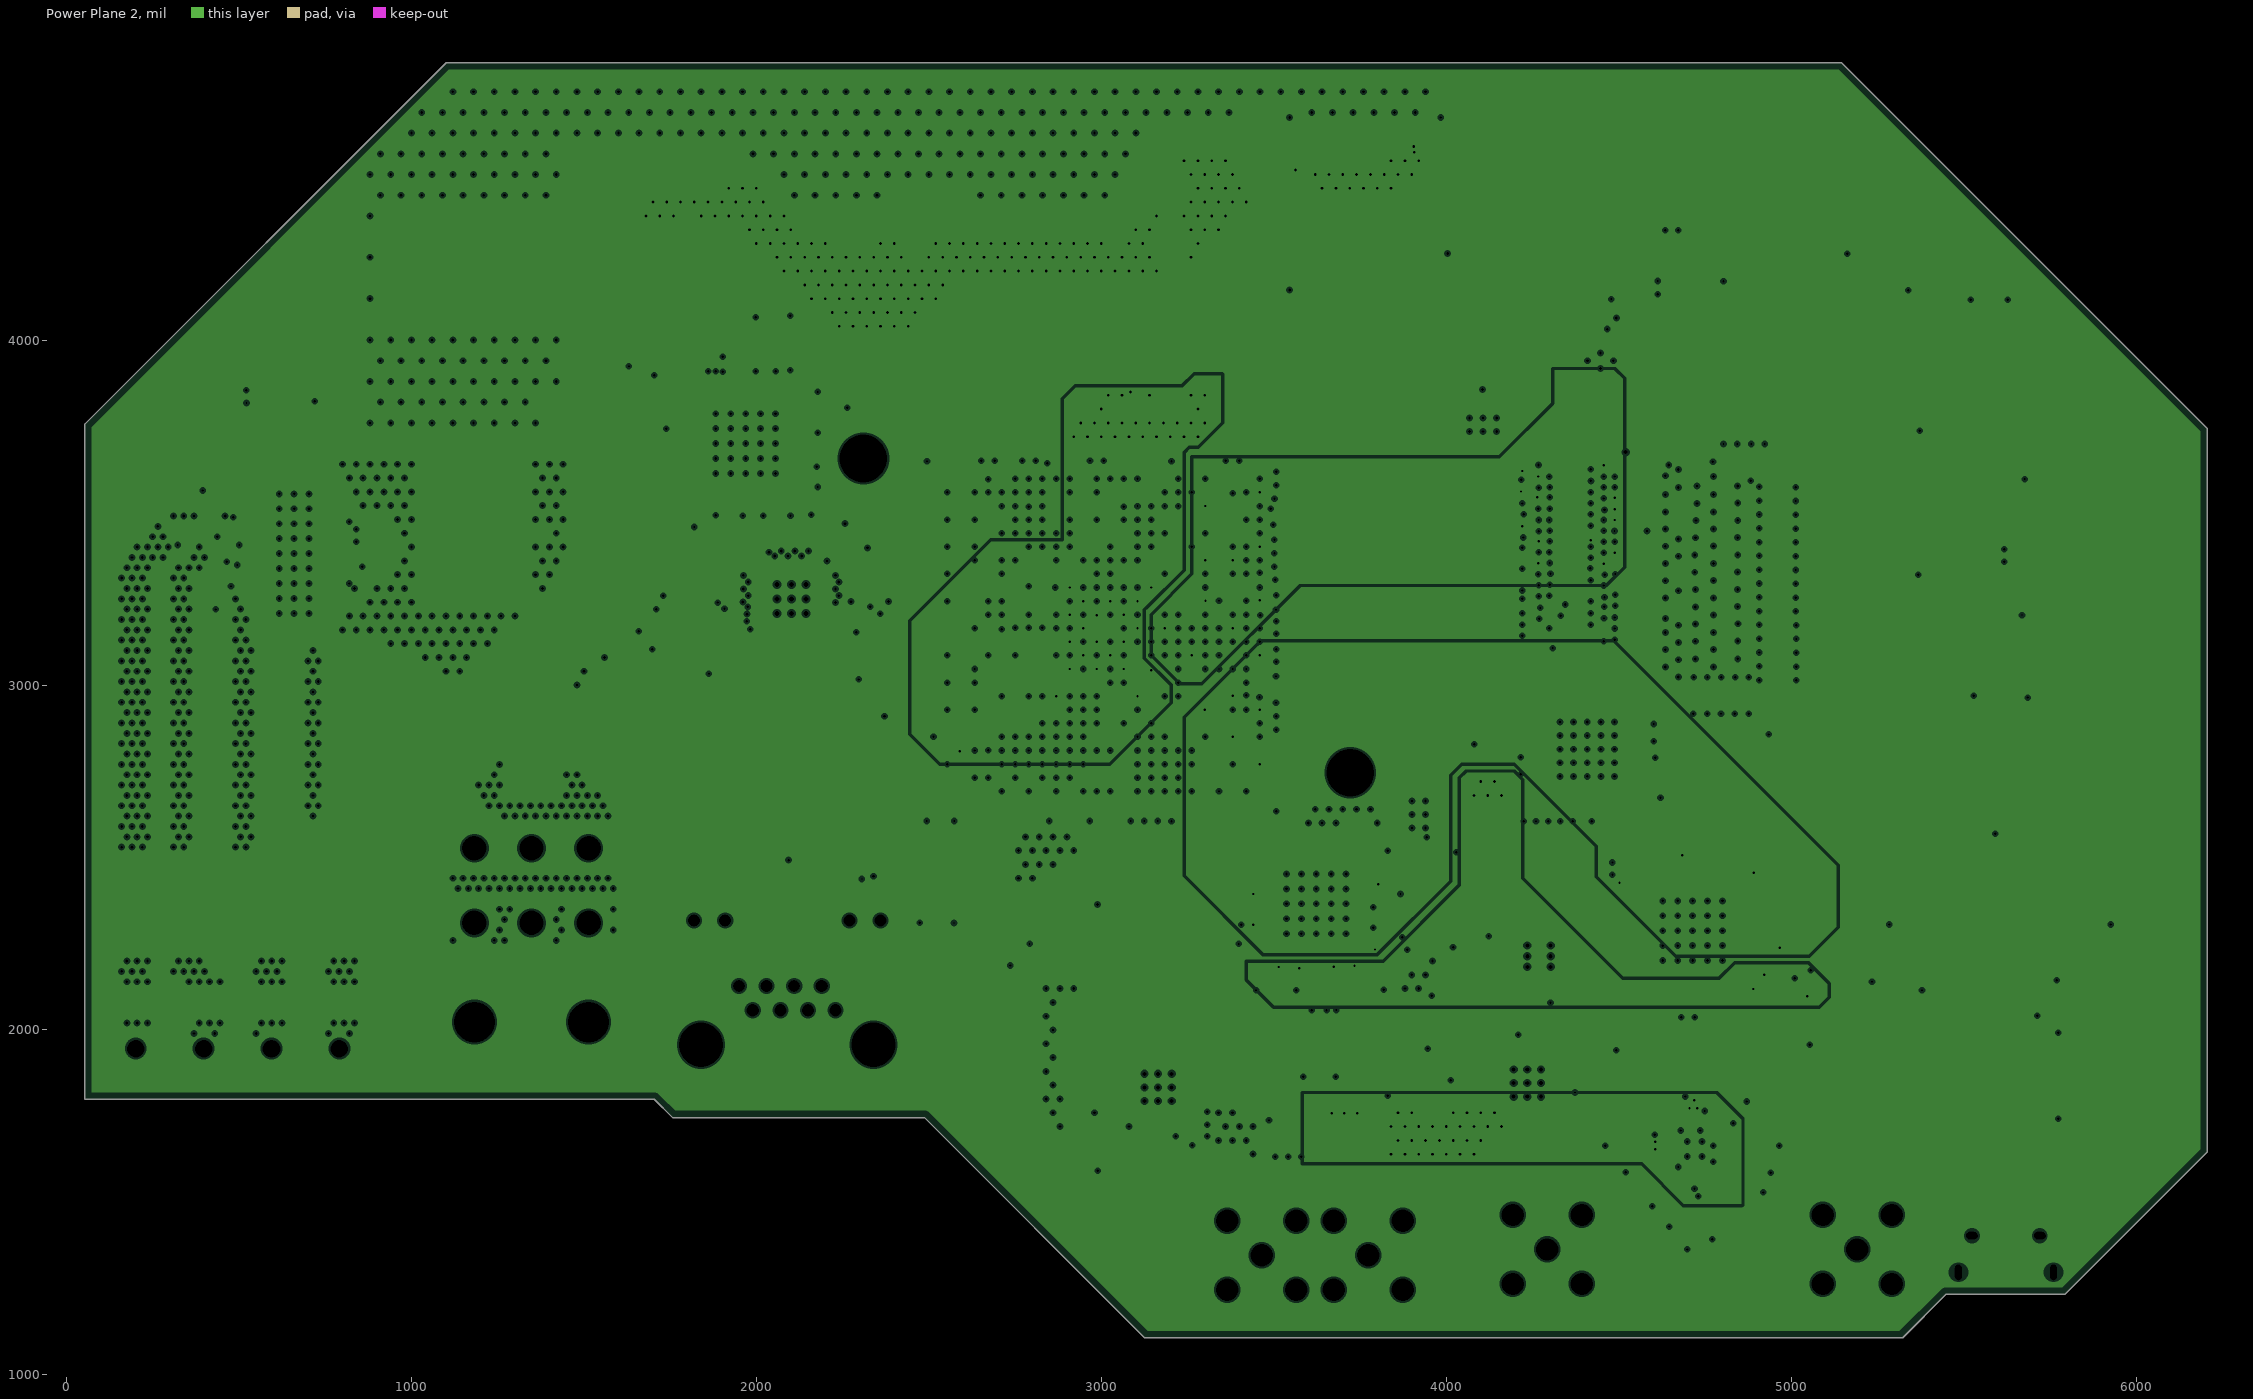
[diagram p10: Power Plane 2, clearances drawn from the general rule]
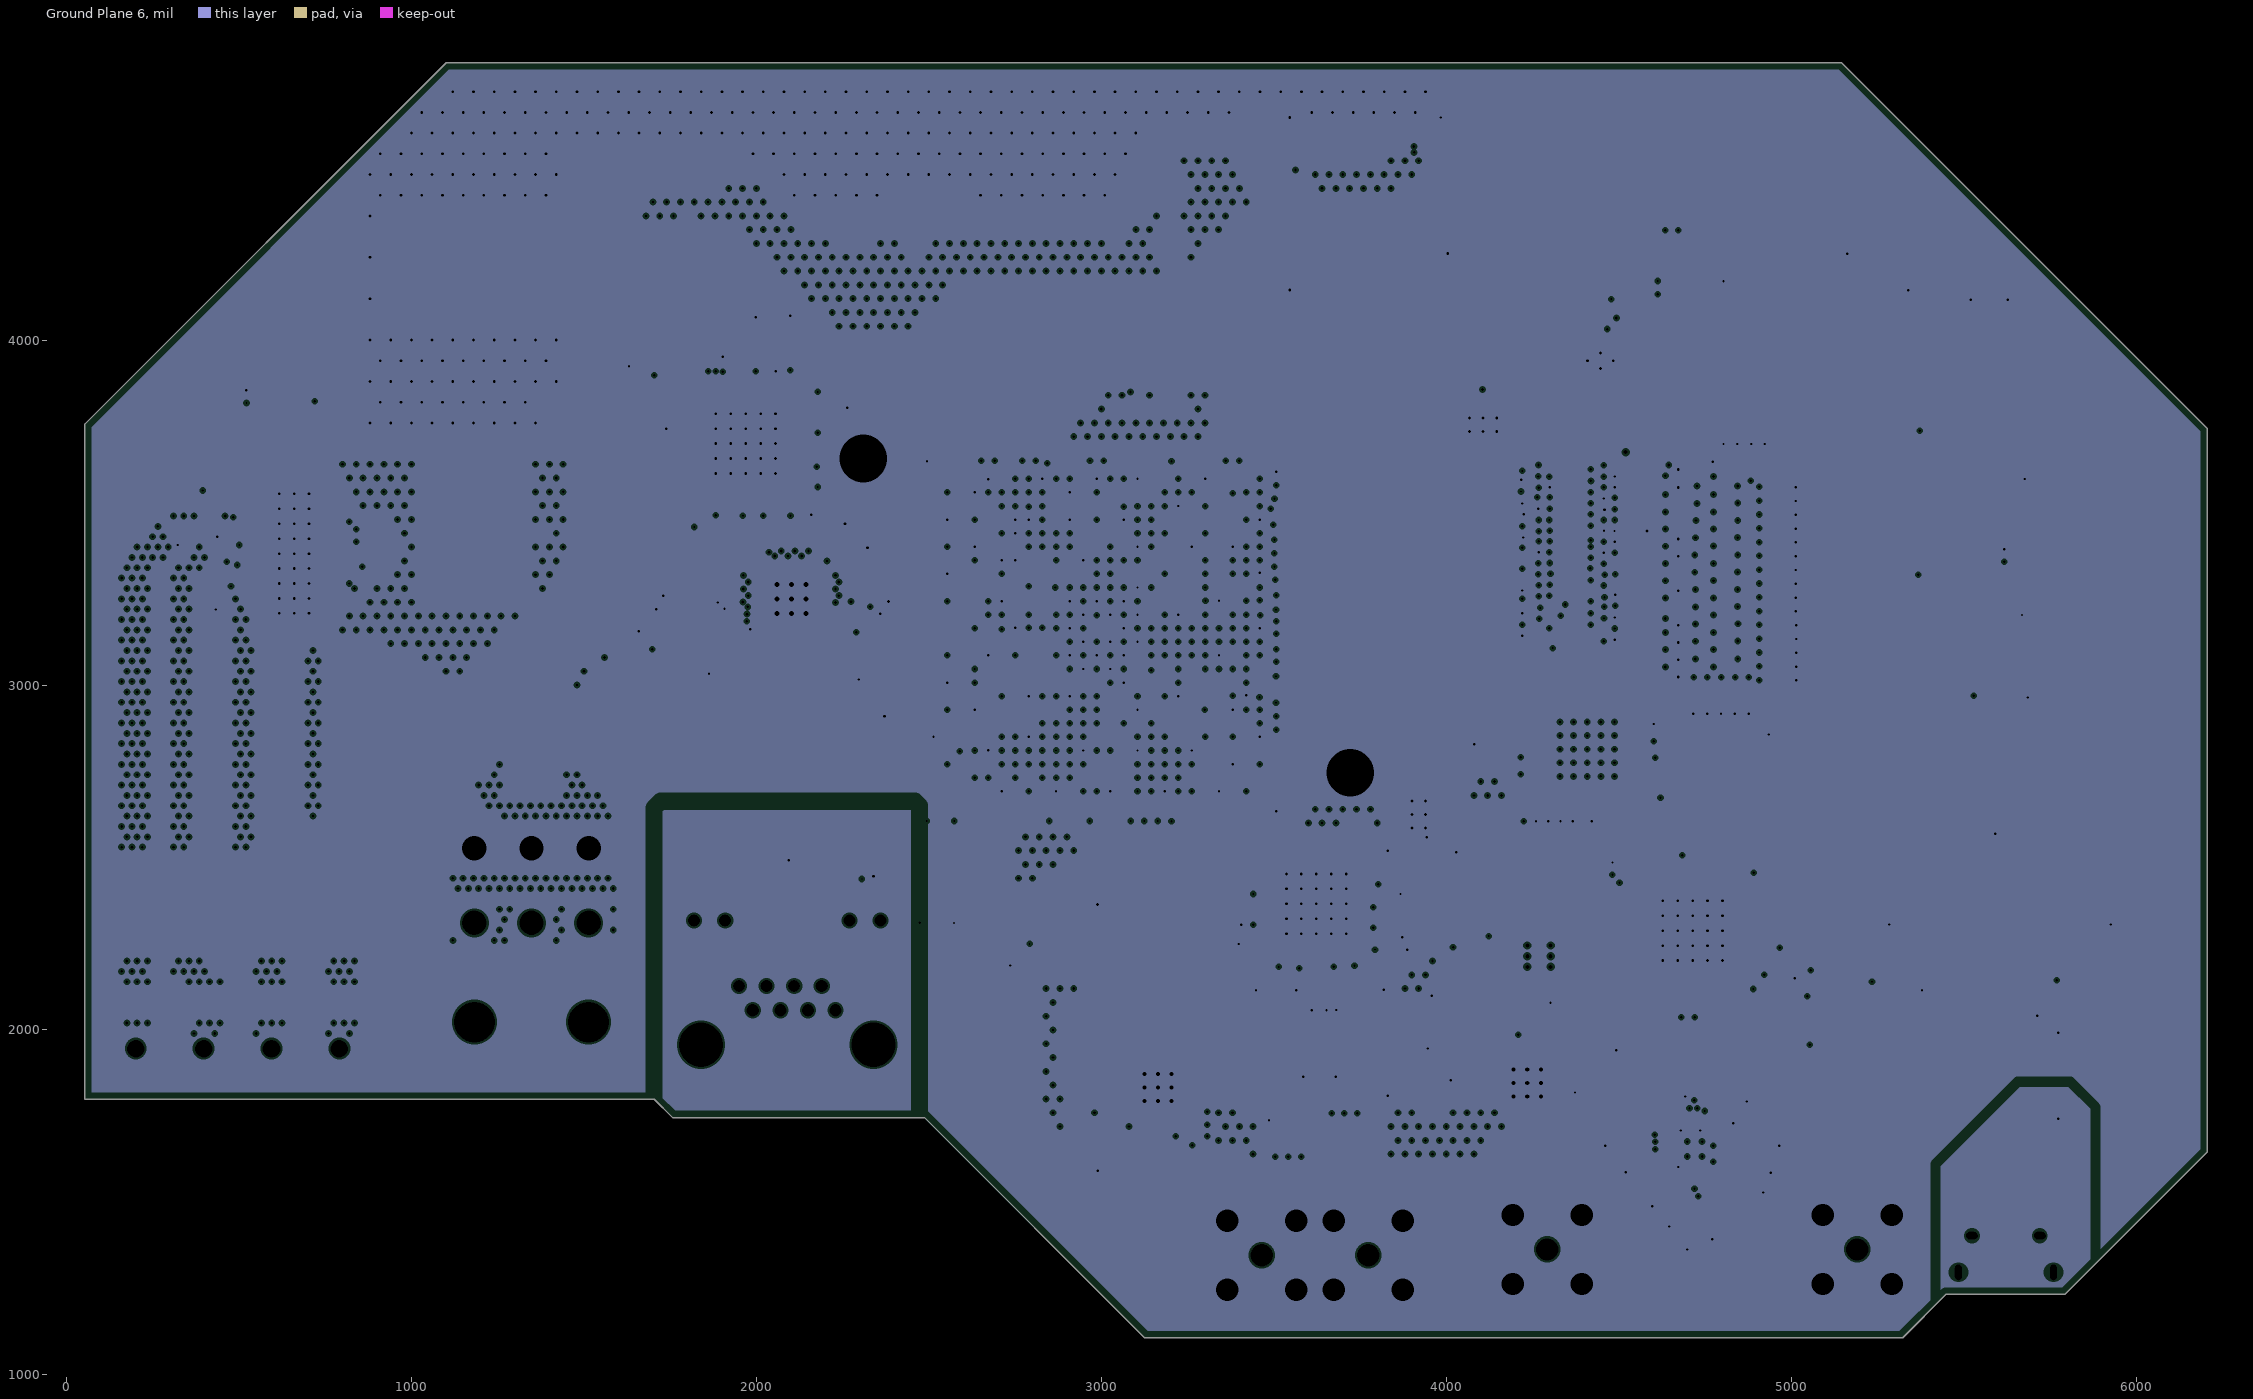
[diagram p11: Ground Plane 6, clearances drawn from the general rule]
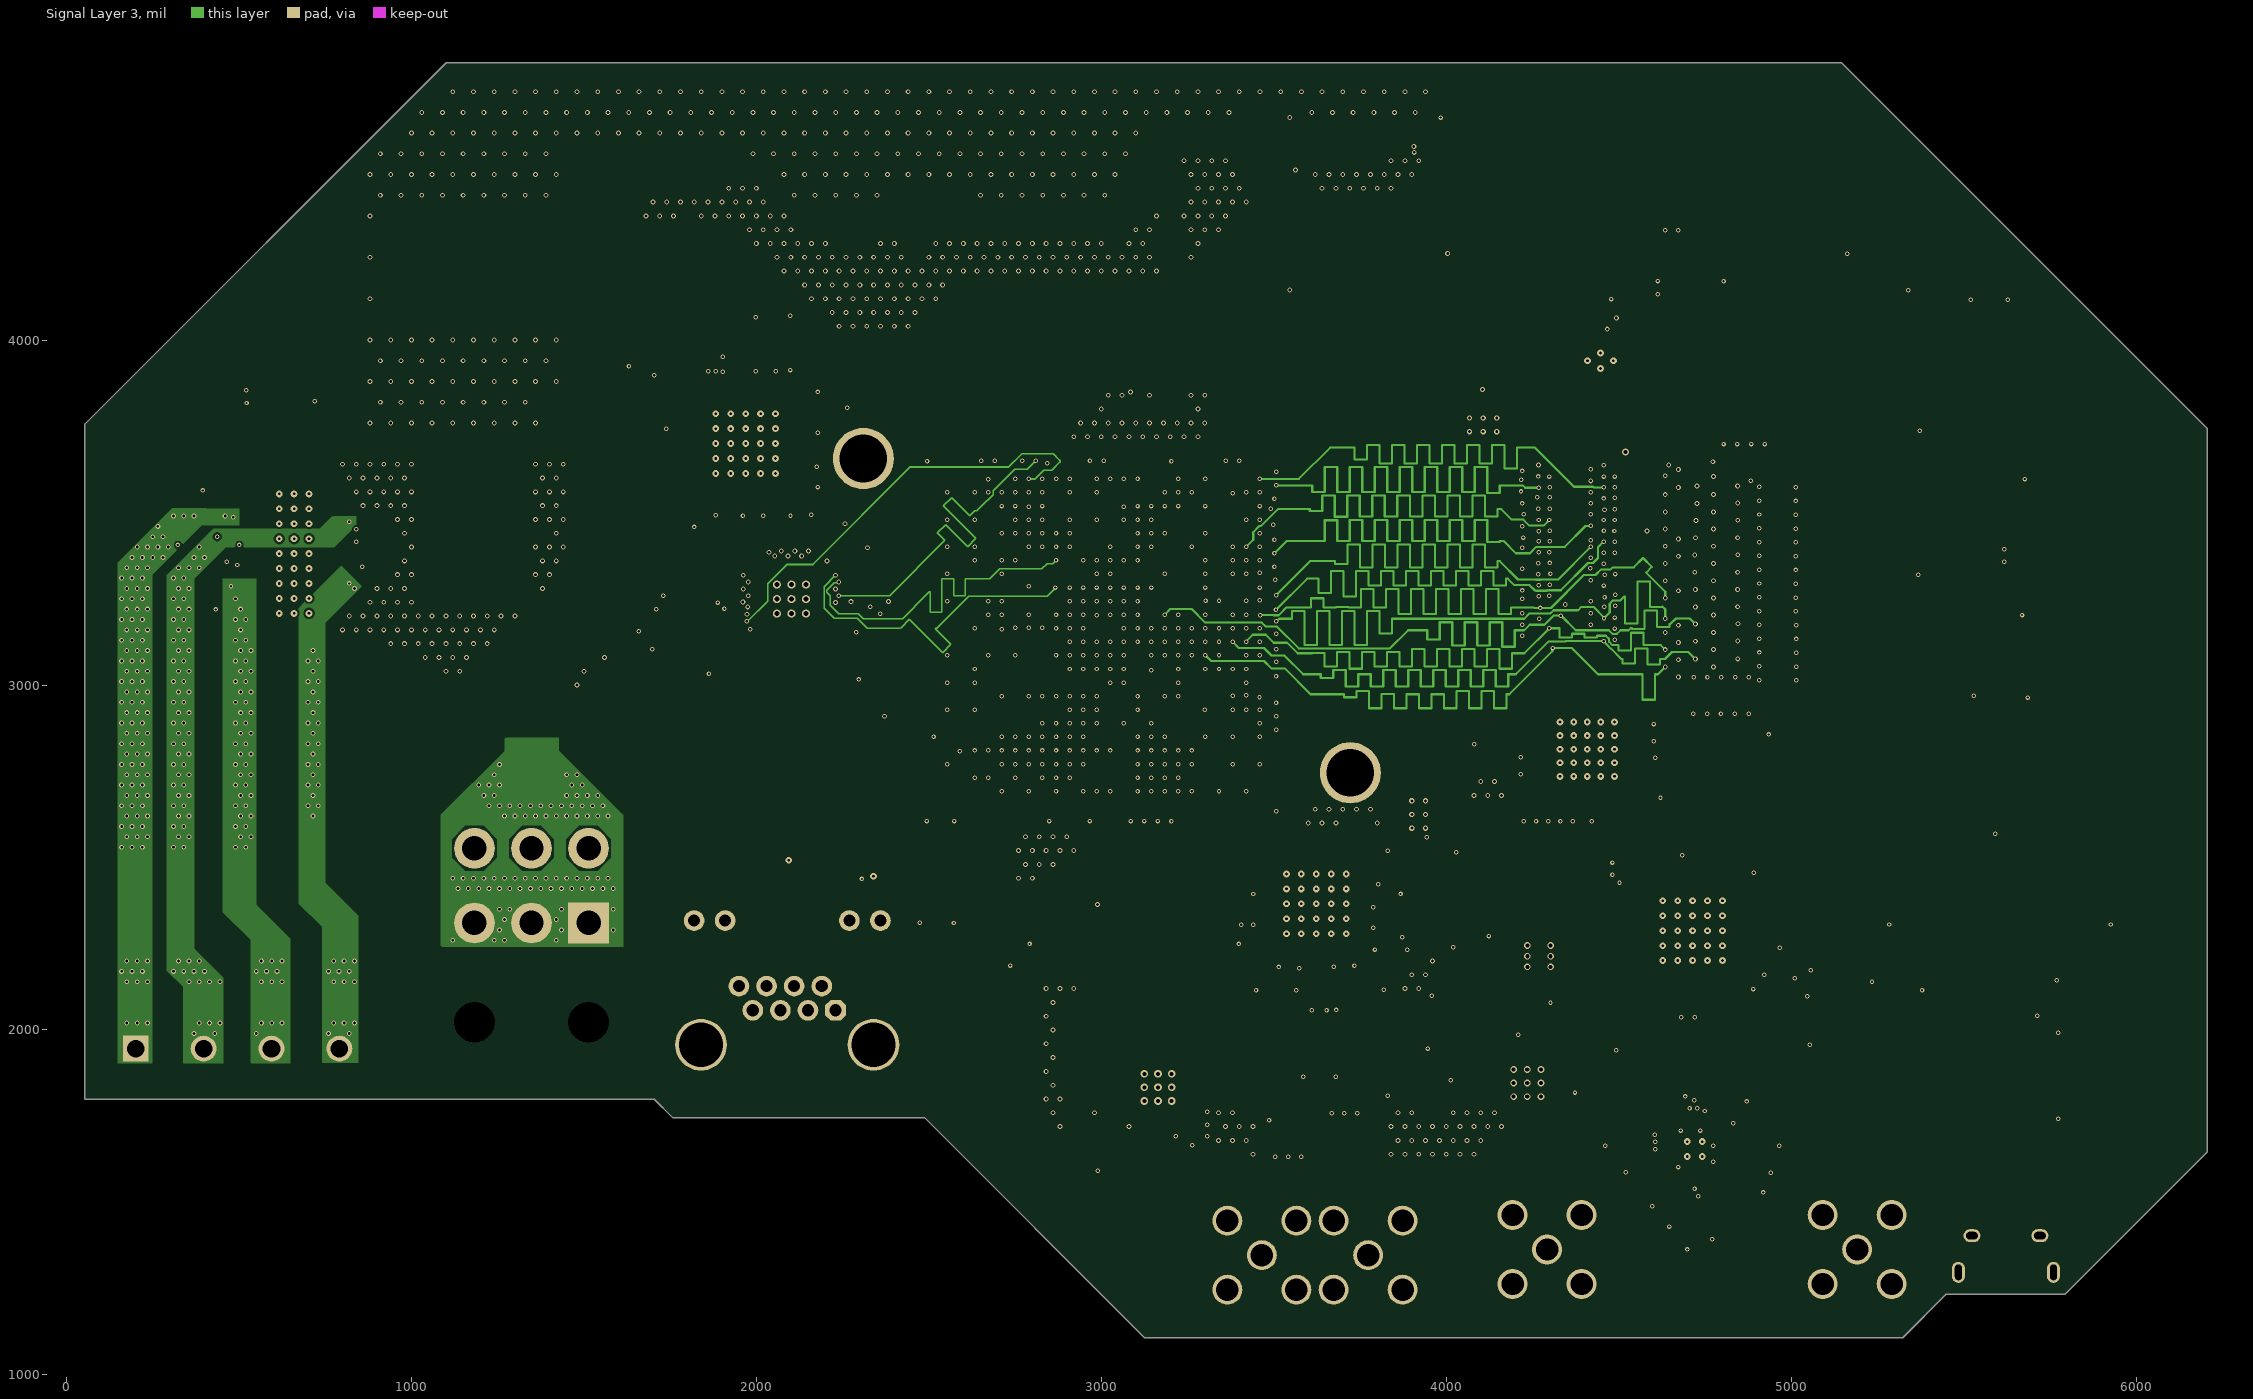
[diagram p12: Signal Layer 3]
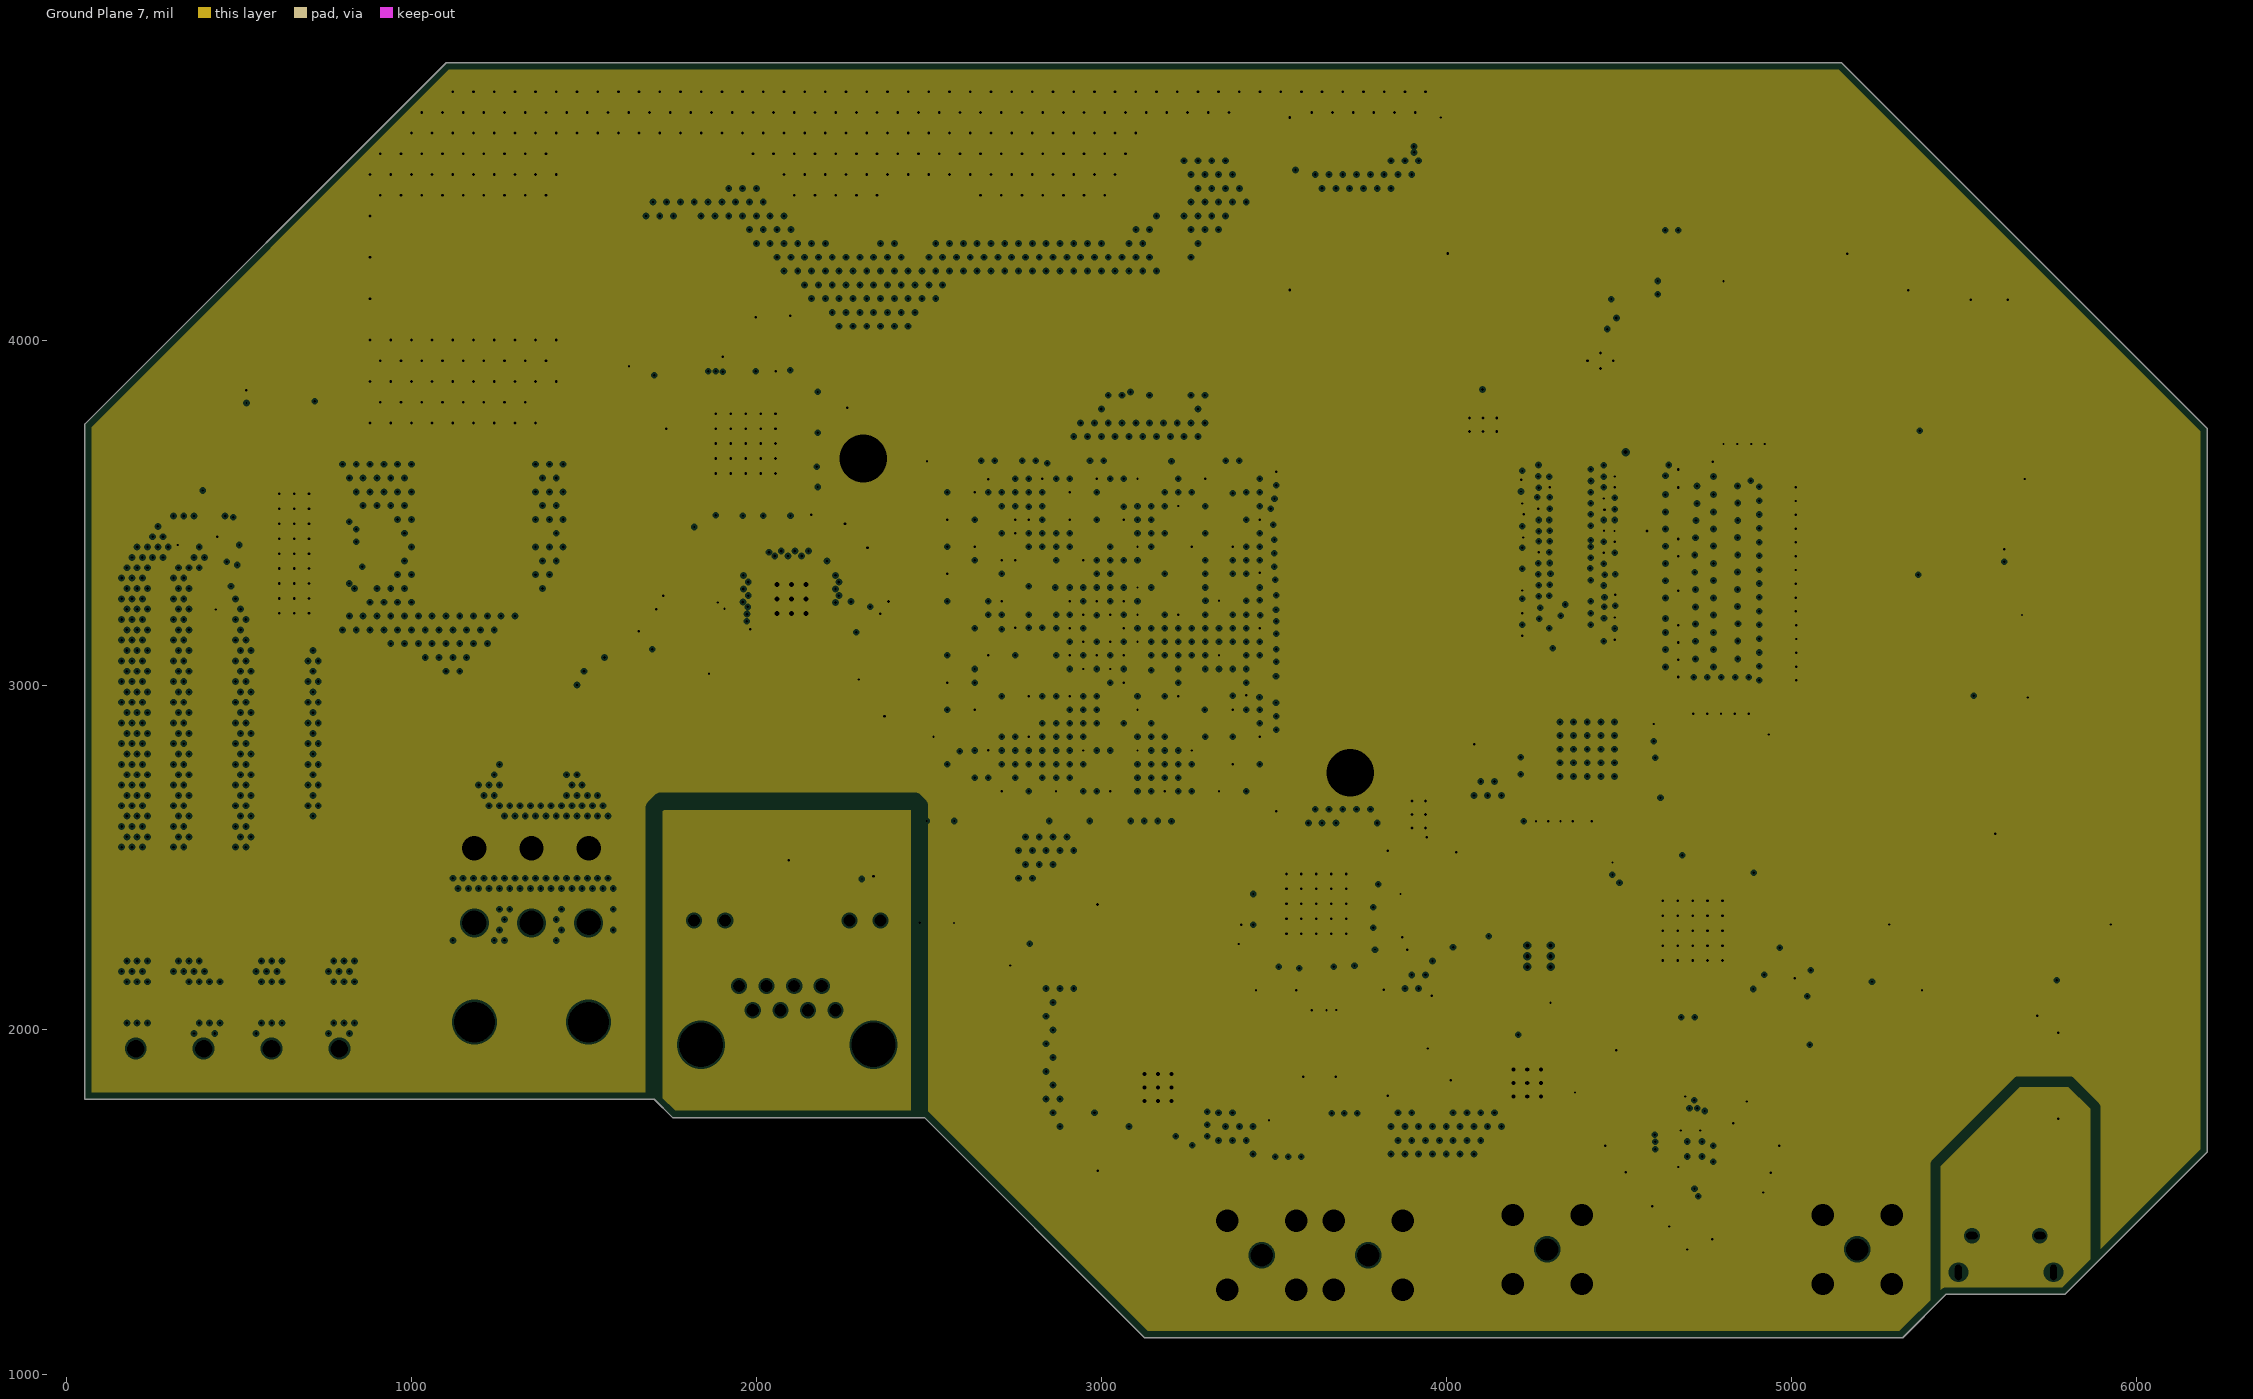
[diagram p13: Ground Plane 7, clearances drawn from the general rule]
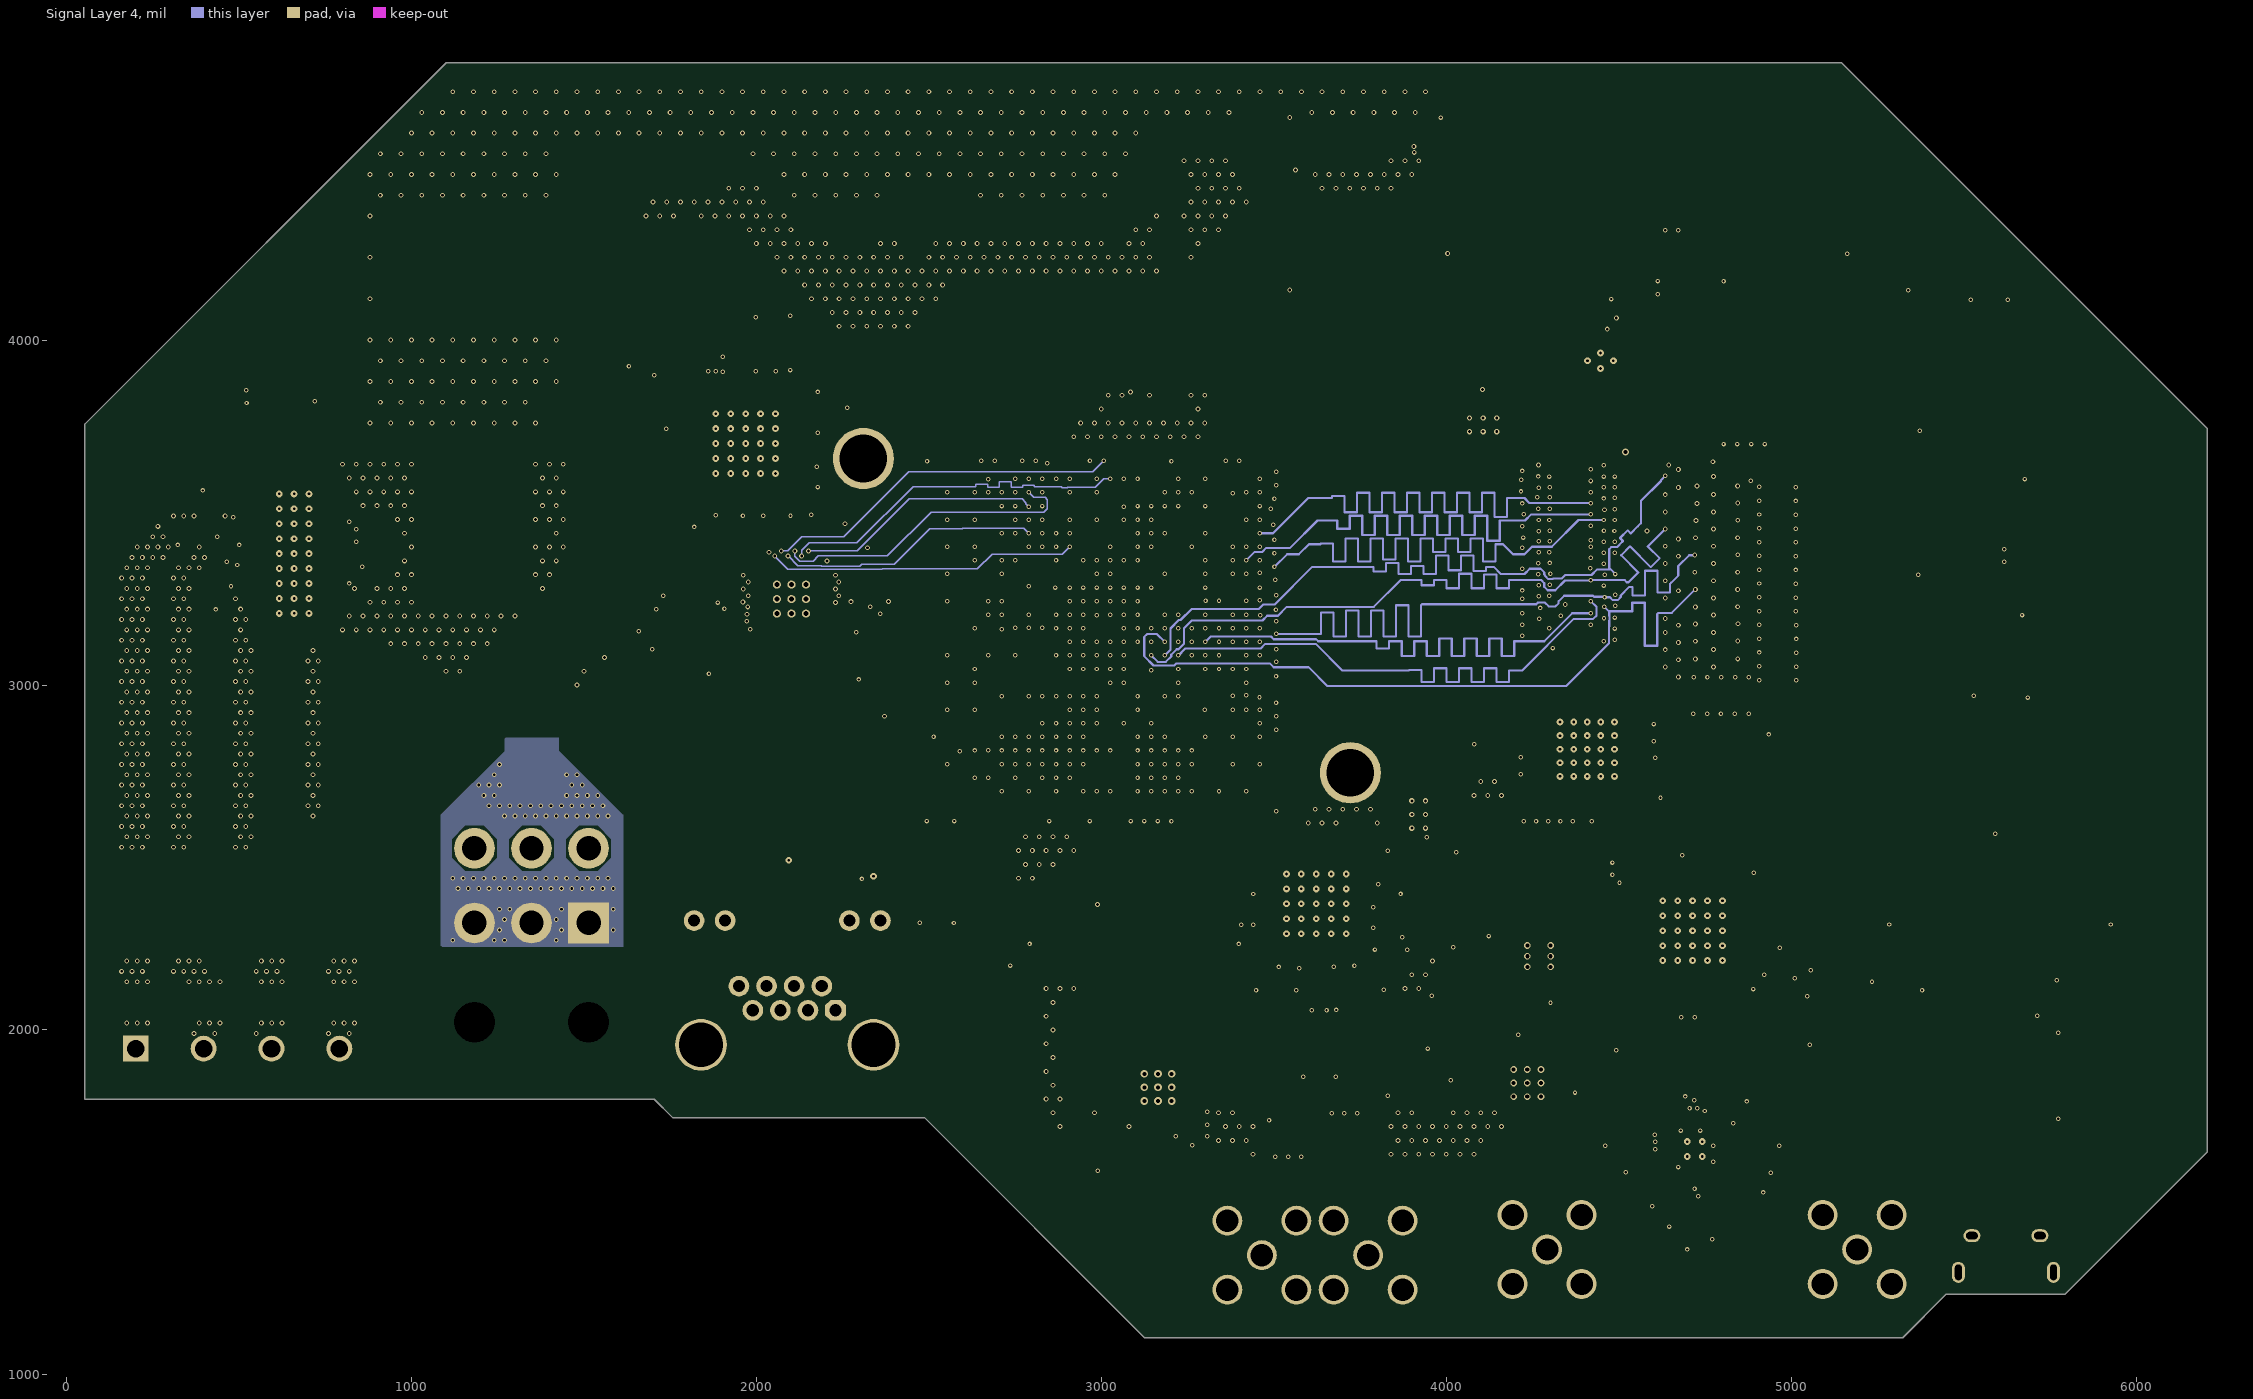
[diagram p14: Signal Layer 4]
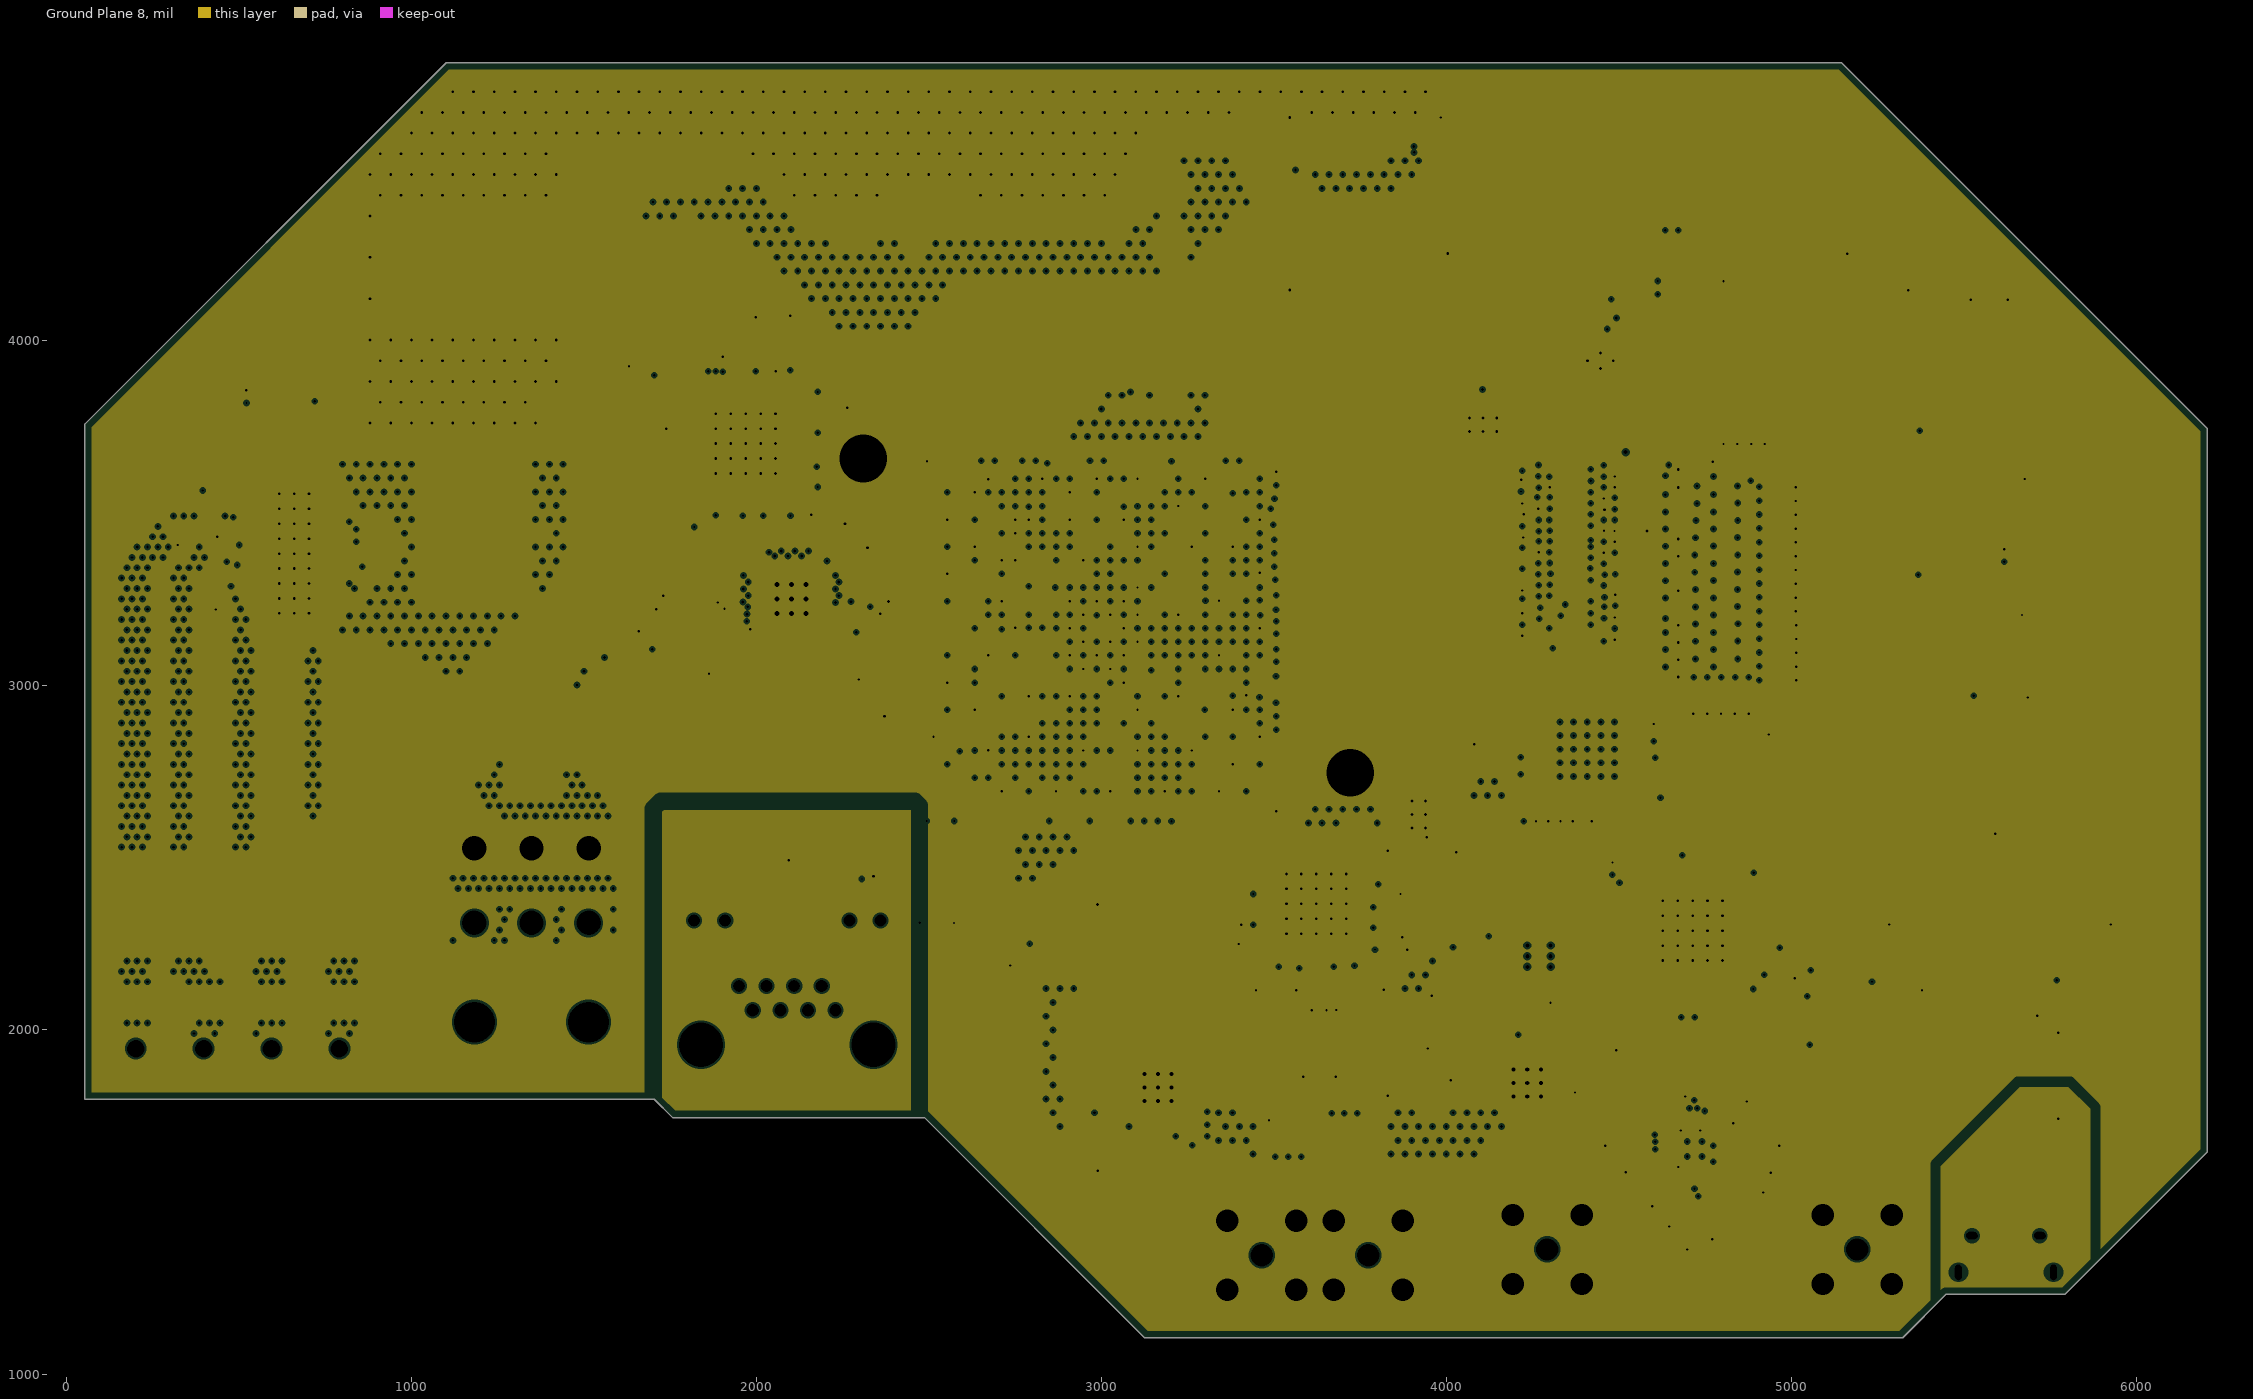
[diagram p15: Ground Plane 8, clearances drawn from the general rule]
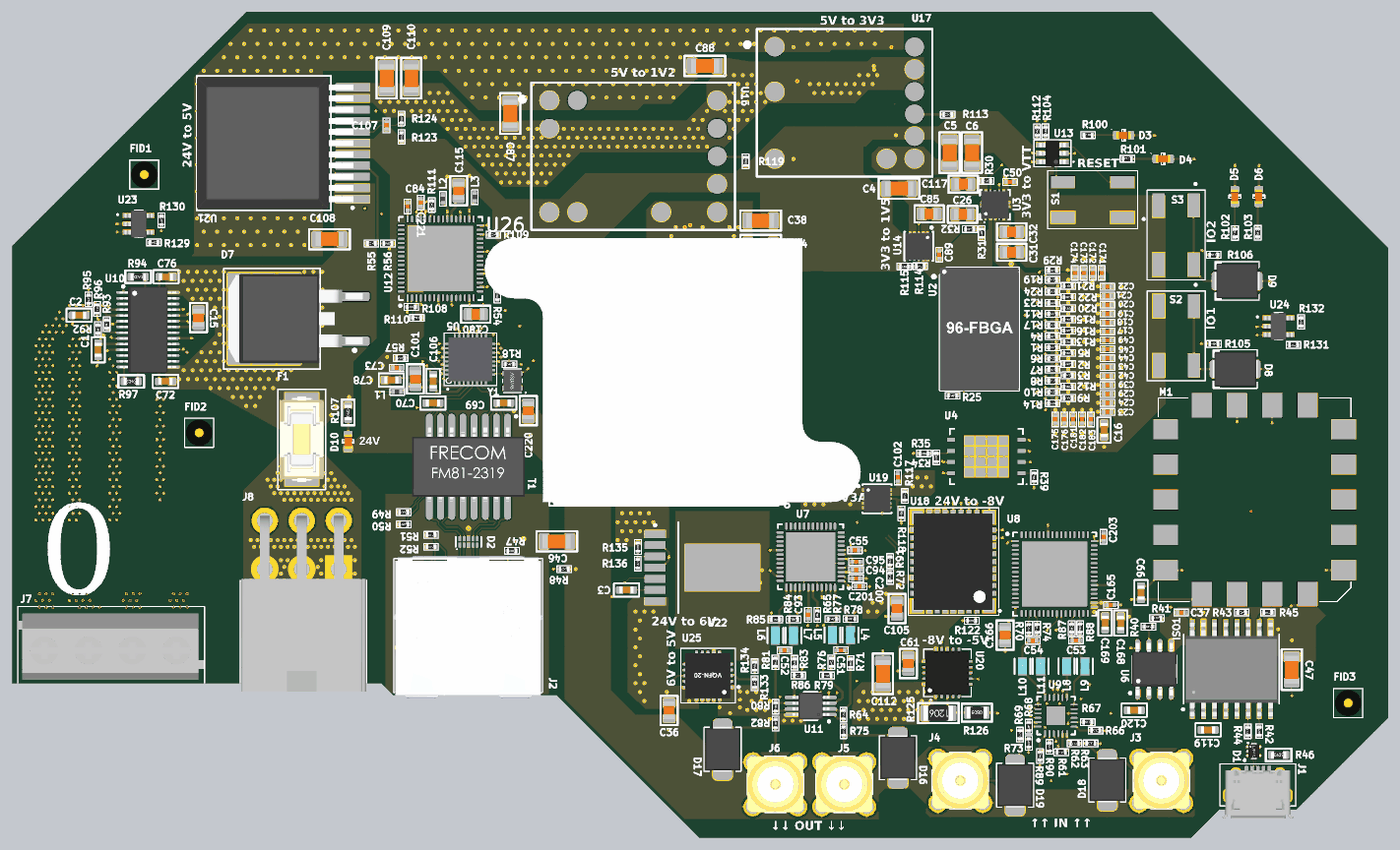
[diagram p22: 3D render of the assembled board from above, using the file's embedded part models]
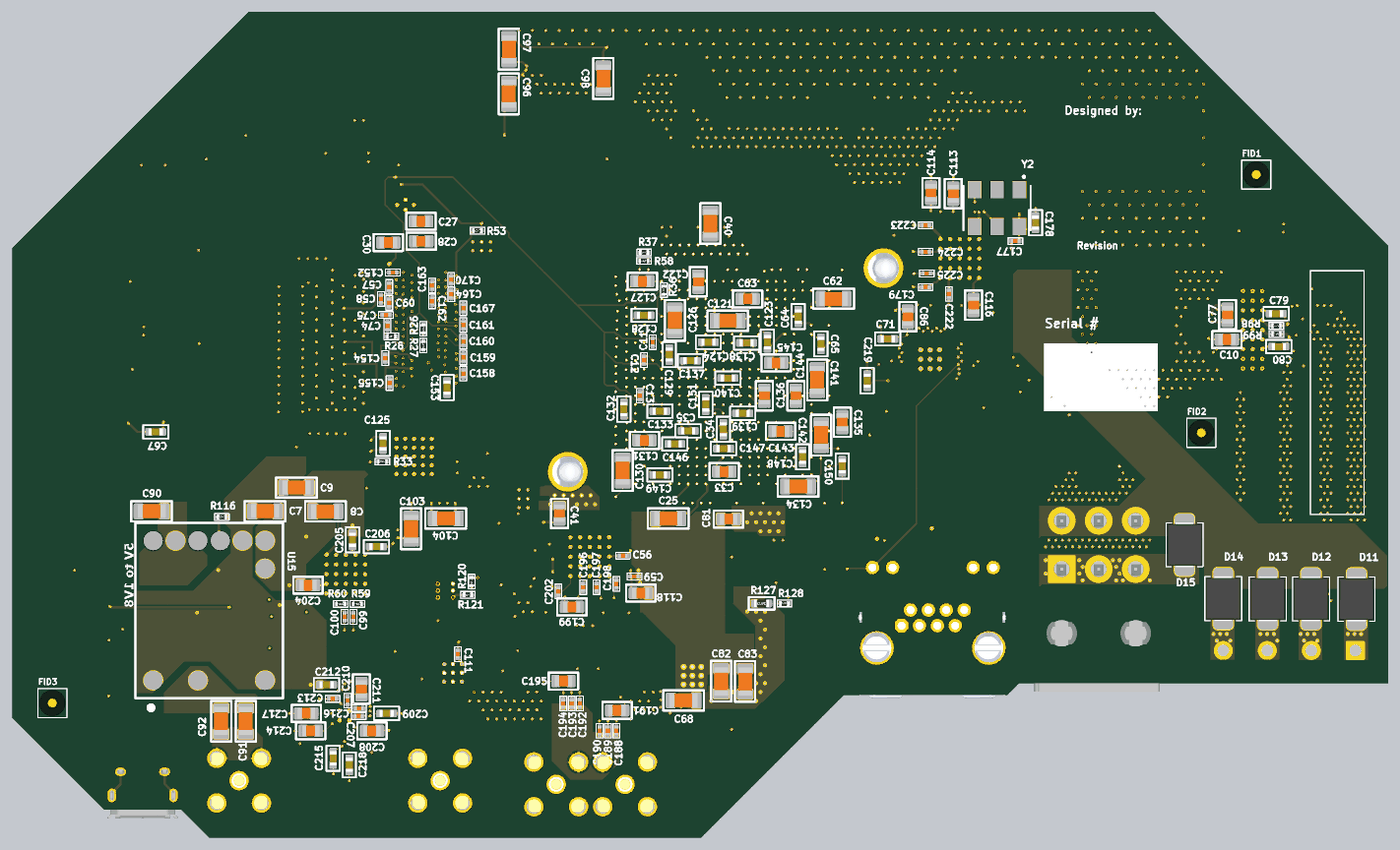
[diagram p23: 3D render of the assembled board from below, using the file's embedded part models]

## Layer stack, top to bottom
Top Solder: solder mask 0.4, Solder Resist, Dk 3.5
Top: signal copper 1.378
Dielectric 6: prepreg 3.4, PP-011, Dk 4.1
Ground Plane 1: plane copper 0.709, net (Multiple Nets)
Dielectric 2: prepreg 5.1, PP-017, Dk 4.3
Signal Layer 1: signal copper 0.709
Dielectric 1: prepreg 5.1, PP-017, Dk 4.3
Ground Plane 2: plane copper 0.709, net (Multiple Nets)
Dielectric 8: prepreg 5.1, PP-017, Dk 4.3
Signal Layer 2: signal copper 0.709
Dielectric 9: prepreg 5.1, PP-017, Dk 4.3
Ground Plane 3: plane copper 0.709, net (Multiple Nets)
Dielectric 10: prepreg 3, PP-007, Dk 4.2
Power Plane: plane copper 0.709, net (Multiple Nets)
Dielectric 11: prepreg 3, PP-007, Dk 4.2
Ground Plane 4: plane copper 0.709, net (Multiple Nets)
Dielectric 3: core 3, Core-005, Dk 4.2
Ground Plane 5: plane copper 0.709, net (Multiple Nets)
Dielectric 15: prepreg 3, PP-007, Dk 4.2
Power Plane 2: plane copper 0.709, net (Multiple Nets)
Dielectric 12: prepreg 3, PP-007, Dk 4.2
Ground Plane 6: plane copper 0.709, net (Multiple Nets)
Dielectric 4: prepreg 5.1, PP-017, Dk 4.3
Signal Layer 3: signal copper 0.709
Dielectric 5: prepreg 5.1, PP-017, Dk 4.3
Ground Plane 7: plane copper 0.709, net (Multiple Nets)
Dielectric 13: prepreg 5.1, PP-017, Dk 4.3
Signal Layer 4: signal copper 0.709
Dielectric 14: prepreg 5.1, PP-017, Dk 4.3
Ground Plane 8: plane copper 0.709, net (Multiple Nets)
Dielectric 7: prepreg 3.4, PP-011, Dk 4.1
Bottom: signal copper 1.378
Bottom Solder: solder mask 0.4, Solder Resist, Dk 3.5

## Board outline
1757,1746 1704,1799 53,1799 53,3756 55,3758 1101,4804 5146,4804 6206,3744 6206,1646 5794,1234 5449,1234 5323,1108 3125.01,1108 2487.01,1746

## Design rules (kind name [scope] priority, off if disabled: settings)
Clearance [All] p1: gap=6 ignorepadtopadclearanceinfootprint=TRUE except(4: Arc-Arc Arc-Track Arc-SMDPad Arc-Text Arc-Hole Track-Track Track-SMDPad Track-Text Track-Hole SMDPad-Text SMDPad-Hole THPad-Text THPad-Hole Via-Text Via-Hole Fill-Text Fill-Hole Poly-Text Poly-Hole Region-Text Region-Hole Text-Text Text-Hole)
ComponentClearance [All] p1: gap=4 collisioncheckmode=3 verticalgap=4 showdistances=FALSE
DiffPairsRouting DIFF_CAN [(InNetClass('CNA_100R') AND InDifferentialPairClass('All Differential Pairs'))] p1: maxlimit=11 minlimit=11 mostfreqgap=11 toplayer_minwidth=5.16 toplayer_maxwidth=5.16 toplayer_prefwidth=5.16 bottomlayer_minwidth=5.16 bottomlayer_maxwidth=5.16 bottomlayer_prefwidth=5.16 impedanceprofiledriven=TRUE impedanceprofileid={A5789B05-BE26-4B8A-8D7B-0FC2F867AD86} impedanceprofilevalue=100.000000 maxuncoupledlength=500
DiffPairsRouting DIFF_CNA [(InNetClass('CNA_100R') AND InDifferentialPairClass('All Differential Pairs'))] p2: maxlimit=11 minlimit=11 mostfreqgap=11 toplayer_minwidth=5.16 toplayer_maxwidth=5.16 toplayer_prefwidth=5.16 bottomlayer_minwidth=5.16 bottomlayer_maxwidth=5.16 bottomlayer_prefwidth=5.16 impedanceprofiledriven=TRUE impedanceprofileid={95AA0A5D-E7C3-4036-B502-8820BD2E936D} impedanceprofilevalue=100.000000 maxuncoupledlength=500
DiffPairsRouting DIFF_DDR3 [(InNetClass('DDR3_80R') AND InDifferentialPairClass('All Differential Pairs'))] p3: maxlimit=5 minlimit=5 mostfreqgap=5 toplayer_minwidth=6.68 toplayer_maxwidth=6.68 toplayer_prefwidth=6.68 midlayer1_minwidth=5.08 midlayer1_maxwidth=5.08 midlayer1_prefwidth=5.08 midlayer2_minwidth=5.08 midlayer2_maxwidth=5.08 midlayer2_prefwidth=5.08 midlayer3_minwidth=5.08 midlayer3_maxwidth=5.08 midlayer3_prefwidth=5.08 midlayer4_minwidth=5.08 midlayer4_maxwidth=5.08 midlayer4_prefwidth=5.08 bottomlayer_minwidth=6.68 bottomlayer_maxwidth=6.68 bottomlayer_prefwidth=6.68 impedanceprofiledriven=TRUE impedanceprofileid={94CB91C9-4EF6-439D-B189-707E4422B6E0} impedanceprofilevalue=80.000000 maxuncoupledlength=500
DiffPairsRouting DIFF_ETH [(InNetClass('ETH_100R') AND InDifferentialPairClass('All Differential Pairs'))] p4: maxlimit=11 minlimit=11 mostfreqgap=11 toplayer_minwidth=5.16 toplayer_maxwidth=5.16 toplayer_prefwidth=5.16 bottomlayer_minwidth=5.16 bottomlayer_maxwidth=5.16 bottomlayer_prefwidth=5.16 impedanceprofiledriven=TRUE impedanceprofileid={F3A0B983-B7AB-4587-8356-38C88C726516} impedanceprofilevalue=100.000000 maxuncoupledlength=500
DiffPairsRouting DIFF_FPGA [(InNetClass('FPGA_100R') AND InDifferentialPairClass('All Differential Pairs'))] p5: maxlimit=11 minlimit=11 mostfreqgap=11 toplayer_minwidth=5.16 toplayer_maxwidth=5.16 toplayer_prefwidth=5.16 bottomlayer_minwidth=5.16 bottomlayer_maxwidth=5.16 bottomlayer_prefwidth=5.16 impedanceprofiledriven=TRUE impedanceprofileid={9D6B281F-69D6-43AF-9D16-9B13851023BE} impedanceprofilevalue=100.000000 maxuncoupledlength=500
DiffPairsRouting Diff_Top [OnLayer('Top')] p6: maxlimit=10 minlimit=4 mostfreqgap=10 toplayer_maxgap=5 toplayer_prefgap=5 toplayer_minwidth=4 toplayer_maxwidth=4 toplayer_prefwidth=4 midlayer1_minwidth=15 midlayer1_maxwidth=15 midlayer1_prefwidth=15 midlayer2_minwidth=15 midlayer2_maxwidth=15 midlayer2_prefwidth=15 midlayer3_minwidth=15 midlayer3_maxwidth=15 midlayer3_prefwidth=15 midlayer4_minwidth=15 midlayer4_maxwidth=15 midlayer4_prefwidth=15 bottomlayer_minwidth=15 bottomlayer_maxwidth=15 bottomlayer_prefwidth=15 maxuncoupledlength=500
DiffPairsRouting Diff_Bottom [OnLayer('Bottom')] p7: maxlimit=10 minlimit=4 mostfreqgap=10 toplayer_minwidth=15 toplayer_maxwidth=15 toplayer_prefwidth=15 midlayer1_minwidth=15 midlayer1_maxwidth=15 midlayer1_prefwidth=15 midlayer2_minwidth=15 midlayer2_maxwidth=15 midlayer2_prefwidth=15 midlayer3_minwidth=15 midlayer3_maxwidth=15 midlayer3_prefwidth=15 midlayer4_minwidth=15 midlayer4_maxwidth=15 midlayer4_prefwidth=15 bottomlayer_minwidth=4 bottomlayer_maxwidth=4 bottomlayer_prefwidth=4 impedanceprofiledriven=TRUE maxuncoupledlength=500
DiffPairsRouting Diff_Internal_80 [OnLayer('Signal 40 1')] p8: maxlimit=10 minlimit=4 mostfreqgap=10 toplayer_minwidth=15 toplayer_maxwidth=15 toplayer_prefwidth=15 midlayer1_maxgap=6 midlayer1_prefgap=6 midlayer1_minwidth=4 midlayer1_maxwidth=4 midlayer1_prefwidth=4 midlayer2_maxgap=6 midlayer2_prefgap=6 midlayer2_minwidth=4 midlayer2_maxwidth=4 midlayer2_prefwidth=4 midlayer3_minwidth=15 midlayer3_maxwidth=15 midlayer3_prefwidth=15 midlayer4_minwidth=15 midlayer4_maxwidth=15 midlayer4_prefwidth=15 bottomlayer_minwidth=15 bottomlayer_maxwidth=15 bottomlayer_prefwidth=15 impedanceprofiledriven=TRUE maxuncoupledlength=500
DiffPairsRouting Diff_Internal_80_2 [OnLayer('Signal 40 2')] p9: maxlimit=10 minlimit=4 mostfreqgap=10 toplayer_minwidth=15 toplayer_maxwidth=15 toplayer_prefwidth=15 midlayer1_maxgap=6 midlayer1_prefgap=6 midlayer1_minwidth=4 midlayer1_maxwidth=4 midlayer1_prefwidth=4 midlayer2_maxgap=6 midlayer2_prefgap=6 midlayer2_minwidth=4 midlayer2_maxwidth=4 midlayer2_prefwidth=4 midlayer3_minwidth=15 midlayer3_maxwidth=15 midlayer3_prefwidth=15 midlayer4_minwidth=15 midlayer4_maxwidth=15 midlayer4_prefwidth=15 bottomlayer_minwidth=15 bottomlayer_maxwidth=15 bottomlayer_prefwidth=15 impedanceprofiledriven=TRUE maxuncoupledlength=500
DiffPairsRouting Diff_Internal_100 [OnLayer('Signal 50 1')] p10: maxlimit=10 minlimit=4 mostfreqgap=10 toplayer_minwidth=15 toplayer_maxwidth=15 toplayer_prefwidth=15 midlayer1_minwidth=15 midlayer1_maxwidth=15 midlayer1_prefwidth=15 midlayer2_minwidth=15 midlayer2_maxwidth=15 midlayer2_prefwidth=15 midlayer3_minwidth=15 midlayer3_maxwidth=15 midlayer3_prefwidth=15 midlayer4_minwidth=15 midlayer4_maxwidth=15 midlayer4_prefwidth=15 bottomlayer_minwidth=15 bottomlayer_maxwidth=15 bottomlayer_prefwidth=15 impedanceprofiledriven=TRUE maxuncoupledlength=500
HoleSize [All] p1: absolutevalues=TRUE maxlimit=1000 minlimit=4 maxpercent=80.000 minpercent=20.000
HoleToHoleClearance [All] p1: gap=10 allowstackedmicrovias=FALSE
MatchedLengths MatchedLengths_DDR3 [InNetClass('DDR3_40R')] p1: tolerance=1 checknetsindiffpair=FALSE checkdiffpairvsdiffpair=TRUE checkxsignals=TRUE checkothers=TRUE
MatchedLengths MatchedLengths_ETH [InNetClass('ETH_TRANS_50R')] p2: tolerance=1 checknetsindiffpair=FALSE checkdiffpairvsdiffpair=TRUE checkxsignals=TRUE checkothers=TRUE
MatchedLengths MatchedLengths_DDR3_A [(InNetClass('DDR3_A[0..14]') OR InNetClass('DDR3_BA[0..2]') OR InDifferentialPair('DDR3_CK') OR DDR3_CKE OR DDR3_UDM OR DDR3_LDM OR DDR3_ODT)] p3 off: tolerance=1 checknetsindiffpair=TRUE checkdiffpairvsdiffpair=FALSE checkxsignals=FALSE checkothers=FALSE
MatchedLengths MatchedLengths_DDR3_DQ [InNetClass('DDR3_DQ[0..15]')] p4 off: tolerance=1 checknetsindiffpair=FALSE checkdiffpairvsdiffpair=TRUE checkxsignals=TRUE checkothers=TRUE
MinimumSolderMaskSliver [All] p1: minsoldermaskwidth=4
PlaneClearance [All] p1: clearance=6
PlaneConnect [All] p1: pad.planeconnectstyle=Relief pad.reliefexpansion=20 pad.reliefentries=4 pad.reliefconductorwidth=10 pad.reliefairgap=10 via.planeconnectstyle=Direct via.reliefexpansion=20 via.reliefentries=4 via.reliefconductorwidth=10 via.reliefairgap=10
PolygonConnect [All] p1: thpad.connectstyle=Relief thpad.reliefconductorwidth=10 thpad.reliefentries=4 thpad.polygonreliefangle="90 Angle" thpad.airgapwidth=10 smdpad.connectstyle=Direct smdpad.reliefconductorwidth=10 smdpad.reliefentries=4 smdpad.polygonreliefangle="90 Angle" smdpad.airgapwidth=10 via.connectstyle=Direct via.reliefconductorwidth=10 via.reliefentries=4 via.polygonreliefangle="90 Angle" via.airgapwidth=10
RoutingVias [All] p1: holewidth=7 width=13 viastyle="Through Hole" minholewidth=7 minwidth=13 maxholewidth=10 maxwidth=20
SilkToSilkClearance [All] p1: silktosilkclearance=4
SilkToSolderMaskClearance [IsPad] p1: minsilkscreentomaskgap=2 clearancetoexposedcopper=FALSE
SolderMaskExpansion [All] p1: expansion=2 istentingtop=FALSE
SupplyNets "Schematic Supply Nets_15" [InNet('GND_ETH')] p1: voltage=0.000
SupplyNets "Schematic Supply Nets_14" [InNet('VCC1V5')] p2: voltage=0.000
SupplyNets "Schematic Supply Nets_13" [InNet('6V')] p3: voltage=0.000
SupplyNets "Schematic Supply Nets_12" [InNet('CLK_1V8')] p4: voltage=0.000
SupplyNets "Schematic Supply Nets_11" [InNet('5V')] p5: voltage=0.000
SupplyNets "Schematic Supply Nets_10" [InNet('ANA_3V3')] p6: voltage=0.000
SupplyNets "Schematic Supply Nets_9" [InNet('1V2')] p7: voltage=0.000
SupplyNets "Schematic Supply Nets_8" [InNet('GND')] p8: voltage=0.000
SupplyNets "Schematic Supply Nets_7" [InNet('-5V_AMP')] p9: voltage=0.000
SupplyNets "Schematic Supply Nets_6" [InNet('VDD_3V3')] p10: voltage=0.000
SupplyNets "Schematic Supply Nets_5" [InNet('-8V')] p11: voltage=0.000
SupplyNets "Schematic Supply Nets_4" [InNet('VREF0V75')] p12: voltage=0.000
SupplyNets "Schematic Supply Nets_3" [InNet('VTT0V75')] p13: voltage=0.000
SupplyNets "Schematic Supply Nets_2" [InNet('+24V')] p14: voltage=0.000
SupplyNets "Schematic Supply Nets_1" [InNet('GND_USB')] p15: voltage=0.000
SupplyNets "Schematic Supply Nets" [InNet('5V_AMP')] p16: voltage=0.000
Width Width_FPGA [InNetClass('TRANS_50R')] p1: maxlimit=5.73 minlimit=3.96 preferedwidth=3.96 toplayer_minwidth=5.73 toplayer_prefwidth=5.73 midlayer1_maxwidth=3.96 midlayer2_maxwidth=3.96 midlayer3_maxwidth=3.96 midlayer4_maxwidth=3.96 bottomlayer_minwidth=5.73 bottomlayer_prefwidth=5.73 impedanceprofiledriven=TRUE impedanceprofileid={EA5B2E81-5056-47AC-9454-416D99CC60E2} impedanceprofilevalue=50.000000 minimp=50.000000 maximp=50.000000 favimp=50.000000
Width Width_DDR3 [InNetClass('DDR3_40R')] p2: maxlimit=8.64 minlimit=6.24 preferedwidth=6.24 toplayer_minwidth=8.64 toplayer_prefwidth=8.64 midlayer1_maxwidth=6.24 midlayer2_maxwidth=6.24 midlayer3_maxwidth=6.24 midlayer4_maxwidth=6.24 bottomlayer_minwidth=8.63 bottomlayer_maxwidth=8.63 bottomlayer_prefwidth=8.63 impedanceprofiledriven=TRUE impedanceprofileid={1D44EE4F-48D2-4BDA-BAD4-70D0A1B19F70} impedanceprofilevalue=40.000000 minimp=50.000000 maximp=50.000000 favimp=50.000000
Width Width_Top [OnLayer('Top')] p3: maxlimit=10 minlimit=4 preferedwidth=10 toplayer_prefwidth=4 bottomlayer_prefwidth=4 minimp=50.000000 maximp=50.000000 favimp=50.000000
Width Width_Bottom [OnLayer('Bottom')] p4: maxlimit=10 minlimit=4 preferedwidth=10 toplayer_prefwidth=4 bottomlayer_prefwidth=4 minimp=50.000000 maximp=50.000000 favimp=50.000000
Width Width_Internal_40 [OnLayer('Signal 40 1')] p5: maxlimit=10 minlimit=4 preferedwidth=10 midlayer1_maxwidth=4 midlayer1_prefwidth=4 midlayer2_maxwidth=4 midlayer2_prefwidth=4 minimp=50.000000 maximp=50.000000 favimp=50.000000
Width Width_Internal_40_2 [OnLayer('Signal 40 2')] p6: maxlimit=10 minlimit=4 preferedwidth=10 midlayer1_maxwidth=4 midlayer1_prefwidth=4 midlayer2_maxwidth=4 midlayer2_prefwidth=4 impedanceprofiledriven=TRUE minimp=50.000000 maximp=50.000000 favimp=50.000000
Width Width_Internal_50 [OnLayer('Signal 50 1')] p7: maxlimit=10 minlimit=4 preferedwidth=10 impedanceprofiledriven=TRUE minimp=50.000000 maximp=50.000000 favimp=50.000000
21 further rules are at their usual default settings.

## Classes and differential pairs
net class ETH_TRANS_50R: ETH_RXC ETH_RXD0 ETH_RXD1 ETH_RXD2 ETH_RXD3 ETH_TXC ETH_TXD0 ETH_TXD1 ETH_TXD2 ETH_TXD3
net class USB: DD_N DD_P UD_N UD_P
net class TRANS_50R: CLK_SPI_CLK CLK_SPI_LE CLK_SPI_MISO CLK_SPI_MOSI ETH_RXC ETH_RXD0 ETH_RXD1 ETH_RXD2 ETH_RXD3 ETH_TXC ETH_TXD0 ETH_TXD1 ETH_TXD2 ETH_TXD3
net class FPGA_100R: FPGA_CLK_N FPGA_CLK_P
net class ETH_100R: RX_ETH_N RX_ETH_P RX_ISO_N RX_ISO_P TX_ETH_N TX_ETH_P TX_ISO_N TX_ISO_P
net class DDR3_80R: DDR3_CK_N DDR3_CK_P DDR3_LDQS_N DDR3_LDQS_P DDR3_UDQS_N DDR3_UDQS_P
net class DDR3_40R: DDR3_A0 DDR3_A1 DDR3_A2 DDR3_A3 DDR3_A4 DDR3_A5 DDR3_A6 DDR3_A7 DDR3_A8 DDR3_A9 DDR3_A10 DDR3_A11 DDR3_A12 DDR3_A13 DDR3_BA0 DDR3_BA1 DDR3_BA2 DDR3_CAS DDR3_CKE DDR3_CS DDR3_DQ0 DDR3_DQ1 DDR3_DQ2 DDR3_DQ3 DDR3_DQ4 DDR3_DQ5 DDR3_DQ6 DDR3_DQ7 DDR3_DQ8 DDR3_DQ9 DDR3_DQ10 DDR3_DQ11 DDR3_DQ12 DDR3_DQ13 DDR3_DQ14 DDR3_DQ15 DDR3_LDM DDR3_ODT DDR3_RAS DDR3_UDM DDR3_WE
net class CNA_100R: CNA_CLK_N CNA_CLK_P CNA_D0_N CNA_D0_P CNA_D1_N CNA_D1_P CNA_D2_N CNA_D2_P CNA_D3_N CNA_D3_P CNA_D4_N CNA_D4_P CNA_D5_N CNA_D5_P CNA_D6_N CNA_D6_P CNA_D7_N CNA_D7_P CNA_DCI_N CNA_DCI_P CNA_FRAME_N CNA_FRAME_P
net class CAN_100R: CAN_CLK_N CAN_CLK_P CAN_CLKOUT_N CAN_CLKOUT_P CAN_DA0_N CAN_DA0_P CAN_DA2_N CAN_DA2_P CAN_DA4_N CAN_DA4_P CAN_DA6_N CAN_DA6_P CAN_DA8_N CAN_DA8_P CAN_DA10_N CAN_DA10_P CAN_DA12_N CAN_DA12_P CAN_DB0_N CAN_DB0_P CAN_DB2_N CAN_DB2_P CAN_DB4_N CAN_DB4_P CAN_DB6_N CAN_DB6_P CAN_DB8_N CAN_DB8_P CAN_DB10_N CAN_DB10_P CAN_DB12_N CAN_DB12_P CAN_IN1_N CAN_IN1_P CAN_IN2_N CAN_IN2_P
component class S7CAS-PLEIADES-CARTE-MERE_P01_TITLE: FID1 FID2 FID3
component class S7CAS-PLEIADES-CARTE-MERE_P01_MOTORS: C1 C2 C10 C15 C72 C76 C77 C79 C80 D11 D12 D13 D14 J7 R92 R93 R94 R95 R96 R97 R98 R99 U10
component class S7CAS-PLEIADES-CARTE-MERE_P01_IO: D3 D4 D5 D6 D8 D9 R30 R100 R101 R102 R103 R104 R105 R106 R112 R129 R130 R131 R132 S1 S2 S3 U13 U23 U24
component class S7CAS-PLEIADES-CARTE-MERE_P01_FPGA-BANK4: C130 C131 C132 C133
component class S7CAS-PLEIADES-CARTE-MERE_P01_FPGA-BANK3: C11 C12 C13 C126 C127 C128 C129
component class S7CAS-PLEIADES-CARTE-MERE_P01_FPGA-BANK2: C37 C47 C66 C67 C119 C120 C121 C122 C123 C124 C125 D1 ISO1 J1 M1 R33 R34 R35 R36 R37 R38 R39 R40 R41 R42 R43 R44 R45 R46 R58 U4 U6
component class S7CAS-PLEIADES-CARTE-MERE_P01_FPGA-BANK1: C62 C63 C64 C65
component class S7CAS-PLEIADES-CARTE-MERE_P01_FPGA-BANK0: C25 C33 C34 C35 U1
component class S7CAS-PLEIADES-CARTE-MERE_P01_FPGA-ALIM: C134 C135 C136 C137 C138 C139 C140 C141 C142 C143 C144 C145 C146 C147 C148 C149 C150 C151 U26
component class S7CAS-PLEIADES-CARTE-MERE_P01_ETHERNET: C46 C69 C70 C71 C73 C78 C86 C101 C106 C219 C220 D2 J2 L1 R18 R47 R48 R49 R50 R51 R52 R57 T1 U5 Y1
component class S7CAS-PLEIADES-CARTE-MERE_P01_DDR3: C16 C17 C18 C19 C20 C21 C22 C23 C24 C26 C27 C28 C29 C30 C31 C32 C39 C42 C43 C44 C45 C49 C50 C57 C58 C60 C74 C75 C117 C152 C153 C154 C155 C158 C159 C160 C161 C162 C163 C164 C167 C170 C171 C172 C173 C174 C175 C176 C181 C182 C183 R1 R2 R3 R4 R5 R6 R7 R8 R9 R10 R11 R12 R13 R14 R15 R16 R17 R19 R20 R21 R22 R23 R24 R25 R26 R27 R28 R29 R31 R32 U2 U3
component class S7CAS-PLEIADES-CARTE-MERE_P01_CNA: C51 C52 C55 C56 C59 C93 C94 C95 C118 C188 C189 C190 C191 C192 C193 C194 C195 C196 C197 C198 C199 C200 C201 C202 D16 D17 J5 J6 L4 L5 L6 L7 R64 R65 R71 R72 R75 R76 R77 R78 R79 R80 R81 R82 R83 R84 R85 R86 R91 U7 U11
component class S7CAS-PLEIADES-CARTE-MERE_P01_CLOCK: C84 C113 C114 C115 C116 C177 C178 C179 C180 C221 C222 C223 C224 C225 L2 L3 R54 R108 R109 R110 R111 U12 Y2
component class S7CAS-PLEIADES-CARTE-MERE_P01_CAN: C53 C54 C99 C100 C165 C166 C168 C169 C203 C204 C205 C206 C207 C208 C209 C210 C211 C212 C213 C214 C215 C216 C217 C218 D18 D19 J3 J4 L8 L9 L10 L11 R59 R60 R61 R62 R63 R66 R67 R68 R69 R70 R73 R74 R87 R88 R89 R90 U8 U9
component class S7CAS-PLEIADES-CARTE-MERE_P01_ALIM: C3 C4 C5 C6 C7 C8 C9 C14 C36 C38 C40 C41 C61 C68 C81 C82 C83 C85 C87 C88 C89 C90 C91 C92 C96 C97 C98 C102 C103 C104 C105 C107 C108 C109 C110 C111 C112 D7 D10 D15 F1 J8 R53 R55 R56 R107 R113 R114 R115 R116 R117 R118 R119 R120 R121 R122 R123 R124 R125 R126 R127 R128 R133 R134 R135 R136 U14 U15 U16 U17 U18 U19 U20 U21 U22 U25
differential pair UD: +UD_P -UD_N
differential pair TX_ISO: +TX_ISO_P -TX_ISO_N
differential pair TX_ETH: +TX_ETH_P -TX_ETH_N
differential pair RX_ISO: +RX_ISO_P -RX_ISO_N
differential pair RX_ETH: +RX_ETH_P -RX_ETH_N
differential pair FPGA_CLK: +FPGA_CLK_P -FPGA_CLK_N
differential pair DD: +DD_P -DD_N
differential pair DDR3_UDQS: +DDR3_UDQS_P -DDR3_UDQS_N
differential pair DDR3_LDQS: +DDR3_LDQS_P -DDR3_LDQS_N
differential pair DDR3_CK: +DDR3_CK_P -DDR3_CK_N
differential pair CNA_FRAME: +CNA_FRAME_P -CNA_FRAME_N
differential pair CNA_DCI: +CNA_DCI_P -CNA_DCI_N
differential pair CNA_D7: +CNA_D7_P -CNA_D7_N
differential pair CNA_D6: +CNA_D6_P -CNA_D6_N
differential pair CNA_D5: +CNA_D5_P -CNA_D5_N
differential pair CNA_D4: +CNA_D4_P -CNA_D4_N
differential pair CNA_D3: +CNA_D3_P -CNA_D3_N
differential pair CNA_D2: +CNA_D2_P -CNA_D2_N
differential pair CNA_D1: +CNA_D1_P -CNA_D1_N
differential pair CNA_D0: +CNA_D0_P -CNA_D0_N
differential pair CNA_CLK: +CNA_CLK_P -CNA_CLK_N
differential pair CAN_IN2: +CAN_IN2_P -CAN_IN2_N
differential pair CAN_IN1: +CAN_IN1_P -CAN_IN1_N
differential pair CAN_DB12: +CAN_DB12_P -CAN_DB12_N
differential pair CAN_DB10: +CAN_DB10_P -CAN_DB10_N
differential pair CAN_DB8: +CAN_DB8_P -CAN_DB8_N
differential pair CAN_DB6: +CAN_DB6_P -CAN_DB6_N
differential pair CAN_DB4: +CAN_DB4_P -CAN_DB4_N
differential pair CAN_DB2: +CAN_DB2_P -CAN_DB2_N
differential pair CAN_DB0: +CAN_DB0_P -CAN_DB0_N
differential pair CAN_DA12: +CAN_DA12_P -CAN_DA12_N
differential pair CAN_DA10: +CAN_DA10_P -CAN_DA10_N
differential pair CAN_DA8: +CAN_DA8_P -CAN_DA8_N
differential pair CAN_DA6: +CAN_DA6_P -CAN_DA6_N
differential pair CAN_DA4: +CAN_DA4_P -CAN_DA4_N
differential pair CAN_DA2: +CAN_DA2_P -CAN_DA2_N
differential pair CAN_DA0: +CAN_DA0_P -CAN_DA0_N
differential pair CAN_CLK: +CAN_CLK_P -CAN_CLK_N
differential pair CAN_CLKOUT: +CAN_CLKOUT_P -CAN_CLKOUT_N

## Components (designator, comment, footprint, x,y, rotation, side; value= is the part's Value field where it differs from the comment)
C1 "CAP - 0603" CAP_0603 437.81,3291.43 r90 top value=0.1uF
C2 "CAP - 0603" CAP_0603 353,3446 r0 top value=0.1uF
C3 "CAP - 0603" CAP_0603 2799.91,2216.94 r0 top value=470pF
C4 "CAP - 1206" CAP_1206 4017.98,4012.22 r0 top value=100uF
C5 "CAP - 1206" CAP_1206 4243.98,4173.22 r270 top value=100uF
C6 "CAP - 1206" CAP_1206 4344.48,4173.22 r270 top value=100uF
C7 "CAP - 1206" CAP_1206 5075.13,2568.78 r180 bottom value=100uF
C8 "CAP - 1206" CAP_1206 4804.98,2568.78 r0 bottom value=100uF
C9 "CAP - 1206" CAP_1206 4934.98,2674.78 r180 bottom value=100uF
C10 "CAP - 0805" CAP_0805 775.5,3337.69 r180 bottom value=0.22uF
C11 "CAP - 0402" CAP_0402 3341.89,3325.33 r90 bottom value=0.01uF
C12 "CAP - 0402" CAP_0402 3380.51,3245.59 r270 bottom value=0.01uF
C13 "CAP - 0402" CAP_0402 3400.2,3085.86 r270 bottom value=0.01uF
C14 "CAP - 1206" CAP_1206 3399.9,3760.22 r180 top value=100uF
C15 "CAP - 0805" CAP_0805 886,3435 r270 top value=0.22uF
C16 "CAP - 0603" CAP_0603 4934.98,2932.22 r90 top value=1uF
C17 "CAP - 0402" CAP_0402 4949.98,3373.55 r180 top value=0.1uF
C18 "CAP - 0402" CAP_0402 4949.98,3413.55 r180 top value=0.1uF
C19 "CAP - 0402" CAP_0402 4949.98,3453.55 r180 top value=0.1uF
C20 "CAP - 0402" CAP_0402 4949.98,3493.55 r180 top value=0.1uF
C21 "CAP - 0402" CAP_0402 4949.98,3533.55 r180 top value=0.1uF
C22 "CAP - 0402" CAP_0402 4949.98,3573.55 r180 top value=0.1uF
C23 "CAP - 0402" CAP_0402 4950.48,3013.55 r180 top value=0.1uF
C24 "CAP - 0402" CAP_0402 4950.48,3053.55 r180 top value=0.1uF
C25 "CAP - 1206" CAP_1206 3272.63,2536.78 r180 bottom value=100uF
C26 "CAP - 0805" CAP_0805 4302.48,3897.22 r0 top value=1000pF
C27 "CAP - 0805" CAP_0805 4377.98,3866.22 r0 bottom value=10uF
C28 "CAP - 0805" CAP_0805 4376.98,3777.22 r0 bottom value=10uF
C29 "CAP - 0402" CAP_0402 4950.48,3093.55 r180 top value=0.1uF
C30 "CAP - 0805" CAP_0805 4524.48,3771.22 r180 bottom value=10uF
C31 "CAP - 0805" CAP_0805 4521.98,3728.22 r180 top value=10uF
C32 "CAP - 0805" CAP_0805 4521.98,3819.22 r180 top value=10uF
C33 "CAP - 0805" CAP_0805 3022.13,2746.78 r0 bottom value=4.7uF
C34 "CAP - 0603" CAP_0603 3026.18,2935.28 r270 bottom value=470nF
C35 "CAP - 0603" CAP_0603 3183.66,2928.38 r180 bottom value=470nF
C36 "CAP - 0805" CAP_0805 2990.13,1677.78 r90 top value=10uF
C37 "CAP - 0402" CAP_0402 5279.43,2115.78 r0 top value=200pF
C38 "CAP - 1206" CAP_1206 3399.9,3869.72 r180 top value=100uF
C39 "CAP - 0402" CAP_0402 4950.48,3133.55 r180 top value=0.1uF
C40 "CAP - 1206" CAP_1206 3084.65,3856.72 r270 bottom value=100uF
C41 "CAP - 0805" CAP_0805 3758.72,2558.91 r90 bottom value=22uF
C42 "CAP - 0402" CAP_0402 4950.48,3173.55 r180 top value=0.1uF
C43 "CAP - 0402" CAP_0402 4949.98,3213.55 r180 top value=0.1uF
C44 "CAP - 0402" CAP_0402 4949.98,3253.55 r180 top value=0.1uF
C45 "CAP - 0402" CAP_0402 4949.98,3293.55 r180 top value=0.1uF
C46 "CAP - 1206" CAP_1206 2488.57,2434.18 r180 top value=1000pF
C47 "CAP - 1206" CAP_1206 5774.13,1860.78 r270 top value=1000pF
C49 "CAP - 0402" CAP_0402 4949.98,3333.55 r180 top value=0.1uF
C50 "CAP - 0402" CAP_0402 4513.98,4042.22 r180 top value=0.1uF
C51 "CAP - 0402" CAP_0402 3758.81,1947.25 r0 top value=100pF
C52 "CAP - 0402" CAP_0402 3506.31,1946.25 r180 top value=100pF
C53 "CAP - 0402" CAP_0402 4809.13,1991.78 r180 top value=100pF
C54 "CAP - 0402" CAP_0402 4616.13,1989.78 r180 top value=100pF
C55 "CAP - 0402" CAP_0402 3821.31,2394.25 r180 top value=470pF
C56 "CAP - 0402" CAP_0402 3475,2370.47 r180 bottom value=470pF
C57 "CAP - 0402" CAP_0402 4519.98,3572.94 r270 bottom value=100nF
C58 "CAP - 0402" CAP_0402 4557.03,3519.02 r270 bottom value=100nF
C59 "CAP - 0402" CAP_0402 3423.31,2277.25 r0 bottom value=68nF
C60 "CAP - 0402" CAP_0402 4519.98,3501.52 r270 bottom value=100nF
C61 "CAP - 0805" CAP_0805 4060.13,1887.78 r90 top value=10uF
C62 "CAP - 1206" CAP_1206 2533.13,3519.78 r0 bottom value=100uF
C63 "CAP - 0805" CAP_0805 2918.13,3518.93 r180 bottom value=4.7uF
C64 "CAP - 0603" CAP_0603 2691.54,3440.19 r90 bottom value=470nF
C65 "CAP - 0603" CAP_0603 2590.13,3318.07 r90 bottom value=470nF
C66 "CAP - 0603" CAP_0603 5100.13,2204.78 r270 top value=0.1uF
C67 "CAP - 0603" CAP_0603 5563.63,2924.22 r180 bottom value=0.1uF
C68 "CAP - 1206" CAP_1206 3203.75,1722.63 r0 bottom value=47uF
C69 "CAP - 0603" CAP_0603 2251.08,3053.18 r180 top value=0.1uF
C70 "CAP - 0603" CAP_0603 1934.57,3053.18 r0 top value=0.1uF
C71 "CAP - 0603" CAP_0603 2291.29,3340.11 r180 bottom value=0.1uF
C72 "CAP - 0603" CAP_0603 739,3150 r0 top value=0.1uF
C73 "CAP - 0402" CAP_0402 1771.86,3211.14 r0 top value=2.2uF
C74 "CAP - 0402" CAP_0402 4527.98,3398.41 r270 bottom value=100nF
C75 "CAP - 0402" CAP_0402 4534.39,3446.96 r180 bottom value=100nF
C76 "CAP - 0603" CAP_0603 741,3618 r0 top value=0.1uF
C77 "CAP - 0805" CAP_0805 772,3448 r270 bottom value=0.22uF
C78 "CAP - 0603" CAP_0603 1748.57,3156.18 r0 top value=0.1uF
C79 "CAP - 0603" CAP_0603 555,3453 r180 bottom value=1000pF
C80 "CAP - 0603" CAP_0603 543.17,3305.76 r180 bottom value=1000pF
C81 "CAP - 0805" CAP_0805 3003.01,2533.94 r180 bottom value=4.7uF
C82 "CAP - 1206" CAP_1206 3036.13,1808.78 r270 bottom value=47uF
C83 "CAP - 1206" CAP_1206 2929.13,1807.78 r270 bottom value=47uF
C84 "CAP - 0402" CAP_0402 1821.37,3932.69 r270 top value=1uF
C85 "CAP - 0805" CAP_0805 4152.98,3899.22 r180 top value=22uF
C86 "CAP - 0805" CAP_0805 2201.57,3439.18 r270 bottom value=22uF
C87 "CAP - 1206" CAP_1206 2280,4348.36 r270 top value=100uF
C88 "CAP - 1206" CAP_1206 3150.18,4561.22 r0 top value=100uF
C89 "CAP - 0402" CAP_0402 4198.08,3717.22 r270 top value=2.2uF
C90 "CAP - 1206" CAP_1206 5582.6,2568.78 r180 bottom value=100uF
C91 "CAP - 1206" CAP_1206 5161.13,1629.36 r90 bottom value=100uF
C92 "CAP - 1206" CAP_1206 5271.13,1629.36 r90 bottom value=100uF
C93 "CAP - 0402" CAP_0402 3611.31,2105.25 r90 top value=0.1uF
C94 "CAP - 0402" CAP_0402 3826.31,2306.25 r0 top value=0.1uF
C95 "CAP - 0402" CAP_0402 3826.08,2343 r0 top value=0.1uF
C96 "CAP - 1206" CAP_1206 3985.2,4436.22 r90 bottom value=100uF
C97 "CAP - 1206" CAP_1206 3985.2,4636.22 r270 bottom value=100uF
C98 "CAP - 1206" CAP_1206 3562.98,4505.22 r270 bottom value=100uF
C99 "CAP - 0402" CAP_0402 4680.13,2096.78 r90 bottom value=0.1uF
C100 "CAP - 0402" CAP_0402 4719.13,2096.78 r90 bottom value=0.1uF
C101 "CAP - 0805" CAP_0805 1855.57,3161.18 r270 top value=22uF
C102 "CAP - 0402" CAP_0402 4012.71,2720 r270 top value=2.2uF
C103 "CAP - 1206" CAP_1206 4422.13,2490.78 r270 bottom value=47uF
C104 "CAP - 1206" CAP_1206 4267.13,2536.78 r180 bottom value=47uF
C105 "CAP - 0805" CAP_0805 4008.89,2133.54 r90 top value=4.7uF
C106 "CAP - 0603" CAP_0603 1936.06,3150.78 r270 top value=0.1uF
C107 "CAP - 0402" CAP_0402 1726.73,4295.22 r90 top value=470pF
C108 "CAP - 1206" CAP_1206 1472.13,3785.74 r0 top value=1.2uF
C109 "CAP - 1206" CAP_1206 1727.23,4506.78 r270 top value=100uF
C110 "CAP - 1206" CAP_1206 1837.23,4506.78 r270 top value=100uF
C111 "CAP - 0402" CAP_0402 4212.7,1929.42 r90 bottom value=1uF
C112 "CAP - 1206" CAP_1206 3945.87,1841.95 r270 top value=47uF
C113 "CAP - 0805" CAP_0805 1998.54,3990.19 r270 bottom value=10uF
C114 "CAP - 0805" CAP_0805 2097.65,3994.19 r270 bottom value=10uF
C115 "CAP - 0805" CAP_0805 2049.65,4003.19 r270 top value=10uF
C116 "CAP - 0805" CAP_0805 1907.96,3491.69 r270 bottom value=10uF
C117 "CAP - 0805" CAP_0805 4304.98,4032.22 r0 top value=4.7uF
C118 "CAP - 0805" CAP_0805 3394.81,2202.97 r0 bottom value=4.7uF
C119 "CAP - 0603" CAP_0603 5400.13,1590.78 r0 top value=0.1uF
C120 "CAP - 0603" CAP_0603 5070.13,1678.78 r0 top value=0.1uF
C121 "CAP - 1206" CAP_1206 3006.5,3421.37 r180 bottom value=100uF
C122 "CAP - 0805" CAP_0805 3138.13,3596.3 r270 bottom value=4.7uF
C123 "CAP - 0603" CAP_0603 2829.33,3325.33 r90 bottom value=470nF
C124 "CAP - 0603" CAP_0603 3093.13,3325.33 r180 bottom value=470nF
C125 "CAP - 0603" CAP_0603 4547.52,2872.5 r270 bottom value=0.1uF
C126 "CAP - 1206" CAP_1206 3243.13,3422.78 r90 bottom value=100uF
C127 "CAP - 0805" CAP_0805 3388.13,3598.49 r0 bottom value=4.7uF
C128 "CAP - 0603" CAP_0603 3380.51,3445.65 r0 bottom value=470nF
C129 "CAP - 0603" CAP_0603 3268.13,3269.78 r90 bottom value=470nF
C130 "CAP - 1206" CAP_1206 3476.13,2750.78 r90 bottom value=100uF
C131 "CAP - 0805" CAP_0805 3379.13,2885.78 r0 bottom value=4.7uF
C132 "CAP - 0603" CAP_0603 3471.02,3025.88 r90 bottom value=470nF
C133 "CAP - 0603" CAP_0603 3309.98,3016.67 r180 bottom value=470nF
C134 "CAP - 1206" CAP_1206 2692.13,2679.78 r180 bottom value=100uF
C135 "CAP - 0805" CAP_0805 2494.39,2967.75 r90 bottom value=4.7uF
C136 "CAP - 0805" CAP_0805 2842.68,3085.86 r90 bottom value=4.7uF
C137 "CAP - 0603" CAP_0603 3173.13,3242.54 r180 bottom value=470nF
C138 "CAP - 0603" CAP_0603 2922.13,3322.08 r180 bottom value=470nF
C139 "CAP - 0603" CAP_0603 2939.52,3007.12 r180 bottom value=470nF
C140 "CAP - 0603" CAP_0603 3005.91,3164.6 r180 bottom value=470nF
C141 "CAP - 1206" CAP_1206 2606.27,3156.18 r90 bottom value=100uF
C142 "CAP - 1206" CAP_1206 2588.94,2909.56 r90 bottom value=100uF
C143 "CAP - 0805" CAP_0805 2770.28,2927.23 r0 bottom value=4.7uF
C144 "CAP - 0805" CAP_0805 2702.13,3085.86 r90 bottom value=4.7uF
C145 "CAP - 0805" CAP_0805 2789.96,3232.99 r0 bottom value=4.7uF
C146 "CAP - 0603" CAP_0603 3243.13,2870.19 r0 bottom value=470nF
C147 "CAP - 0603" CAP_0603 3025.61,2849.64 r0 bottom value=470nF
C148 "CAP - 0603" CAP_0603 2671.85,2811.99 r90 bottom value=470nF
C149 "CAP - 0603" CAP_0603 3309.98,2731.53 r180 bottom value=470nF
C150 "CAP - 0603" CAP_0603 2494.69,2770.9 r90 bottom value=470nF
C151 "CAP - 0603" CAP_0603 3104.92,3046.49 r270 bottom value=470nF
C152 "CAP - 0402" CAP_0402 4504,3637.22 r180 bottom value=100nF
C153 "CAP - 0603" CAP_0603 4261.33,3122.34 r90 bottom value=1uF
C154 "CAP - 0402" CAP_0402 4537.72,3254.18 r270 bottom value=100nF
C155 "CAP - 0402" CAP_0402 4518.41,3142.49 r90 bottom value=100nF
C158 "CAP - 0402" CAP_0402 4188.98,3185.15 r270 bottom value=100nF
C159 "CAP - 0402" CAP_0402 4188.98,3256.87 r270 bottom value=100nF
C160 "CAP - 0402" CAP_0402 4188.98,3328.06 r270 bottom value=100nF
C161 "CAP - 0402" CAP_0402 4188.98,3402.44 r270 bottom value=100nF
C162 "CAP - 0402" CAP_0402 4328.39,3507.92 r90 bottom value=100nF
C163 "CAP - 0402" CAP_0402 4328.39,3578.58 r90 bottom value=100nF
C164 "CAP - 0402" CAP_0402 4242.41,3539.57 r90 bottom value=100nF
C165 "CAP - 0402" CAP_0402 4965.13,2149.78 r180 top value=100nF
C166 "CAP - 0805" CAP_0805 4492.63,2015 r90 top value=2.2uF
C167 "CAP - 0402" CAP_0402 4188.98,3477.26 r270 bottom value=100nF
C168 "CAP - 0603" CAP_0603 5009.13,2068.78 r90 top value=2.2nF
C169 "CAP - 0603" CAP_0603 4939.13,2069.78 r90 top value=2.2nF
C170 "CAP - 0402" CAP_0402 4242.98,3604.22 r90 bottom value=100nF
C171 "CAP - 0402" CAP_0402 4923.65,3635.22 r270 top value=0.1uF
C172 "CAP - 0402" CAP_0402 4883.65,3635.22 r270 top value=0.1uF
C173 "CAP - 0402" CAP_0402 4843.65,3635.22 r270 top value=0.1uF
C174 "CAP - 0402" CAP_0402 4803.65,3635.22 r270 top value=0.1uF
C175 "CAP - 0402" CAP_0402 4716.31,2979.72 r90 top value=0.1uF
C176 "CAP - 0402" CAP_0402 4756.31,2979.72 r90 top value=0.1uF
C177 "CAP - 0402" CAP_0402 1720.65,3777.19 r180 bottom value=4.7nF
C178 "CAP - 0603" CAP_0603 1630.65,3860.19 r270 bottom value=470nF
C179 "CAP - 0402" CAP_0402 2121.65,3572.06 r0 bottom value=2.7nF
C180 "CAP - 0805" CAP_0805 2125.65,3450.19 r180 top value=1uF
C181 "CAP - 0402" CAP_0402 4796.31,2979.72 r90 top value=0.1uF
C182 "CAP - 0402" CAP_0402 4836.31,2979.72 r90 top value=0.1uF
C183 "CAP - 0402" CAP_0402 4876.31,2979.72 r90 top value=0.1uF
C188 "CAP - 0402" CAP_0402 3504.31,1587.25 r90 bottom value=470pF
C189 "CAP - 0402" CAP_0402 3542.31,1587.25 r90 bottom value=470pF
C190 "CAP - 0402" CAP_0402 3579.31,1587.25 r90 bottom value=68nF
C191 "CAP - 0805" CAP_0805 3501.31,1678.25 r0 bottom value=4.7uF
C192 "CAP - 0402" CAP_0402 3667.93,1709.14 r90 bottom value=470pF
C193 "CAP - 0402" CAP_0402 3704.51,1708.8 r90 bottom value=470pF
C194 "CAP - 0402" CAP_0402 3741.91,1708.8 r90 bottom value=68nF
C195 "CAP - 0805" CAP_0805 3741.31,1809.25 r180 bottom value=4.7uF
C196 "CAP - 0402" CAP_0402 3652.65,2228.97 r270 bottom value=470pF
C197 "CAP - 0402" CAP_0402 3593.6,2228.97 r270 bottom value=470pF
C198 "CAP - 0402" CAP_0402 3504.31,2244.25 r270 bottom value=68nF
C199 "CAP - 0805" CAP_0805 3702.93,2140.97 r0 bottom value=4.7uF
C200 "CAP - 0402" CAP_0402 3826.31,2268.25 r180 top value=470pF
C201 "CAP - 0402" CAP_0402 3841.31,2232.25 r180 top value=470pF
C202 "CAP - 0402" CAP_0402 3763.31,2210.25 r90 bottom value=68nF
C203 "CAP - 0402" CAP_0402 4932.13,2454.78 r270 top value=100nF
C204 "CAP - 0805" CAP_0805 4882.63,2238.57 r0 bottom value=2.2uF
C205 "CAP - 0603" CAP_0603 4684.13,2441.28 r90 bottom value=2.2nF
C206 "CAP - 0603" CAP_0603 4577.13,2410.78 r180 bottom value=2.2nF
C207 "CAP - 0402" CAP_0402 4656.13,1652.78 r180 bottom value=100nF
C208 "CAP - 0805" CAP_0805 4597.13,1586.53 r0 bottom value=2.2uF
C209 "CAP - 0603" CAP_0603 4531.63,1664.78 r0 bottom value=2.2nF
C210 "CAP - 0402" CAP_0402 4706.27,1721.28 r90 bottom value=100nF
C211 "CAP - 0805" CAP_0805 4644.63,1773.78 r270 bottom value=2.2uF
C212 "CAP - 0603" CAP_0603 4800.13,1792.78 r180 bottom value=2.2nF
C213 "CAP - 0402" CAP_0402 4773.13,1729.78 r180 bottom value=100nF
C214 "CAP - 0805" CAP_0805 4871.15,1586.53 r180 bottom value=2.2uF
C215 "CAP - 0603" CAP_0603 4770.63,1463.78 r90 bottom value=2.2nF
C216 "CAP - 0402" CAP_0402 4655.13,1687.78 r180 bottom value=100nF
C217 "CAP - 0805" CAP_0805 4891.13,1664.78 r180 bottom value=2.2uF
C218 "CAP - 0603" CAP_0603 4698.47,1434.28 r90 bottom value=2.2nF
C219 "CAP - 0603" CAP_0603 2383.13,3153.18 r270 bottom value=0.1uF
C220 "CAP - 0805" CAP_0805 2361,3019 r90 top value=22uF
C221 "CAP - 0402" CAP_0402 1880.15,3950.19 r270 top value=2.7nF
C222 "CAP - 0402" CAP_0402 2018.23,3541.33 r270 bottom value=2.7nF
C223 "CAP - 0402" CAP_0402 2121.65,3847.65 r0 bottom value=2.7nF
C224 "CAP - 0402" CAP_0402 2121.65,3729.54 r0 bottom value=2.7nF
C225 "CAP - 0402" CAP_0402 2116.65,3633.08 r0 bottom value=2.7nF
D1 "TPD2E001DRLR" TVS_USB_TPD2E001DRLR 5604.13,1495.78 r0 top value="11V Breakdown"
D2 "TPD4E05U06" TVS_DATA_TPD4E05U06 2093.57,2432.18 r90 top value="4 unidirectionnal channels"
D3 "SML-311DTT86" LED_0603 5022,4251.03 r0 top value=ORANGE
D4 "SML-311DTT86" LED_0603 5199,4145 r0 top value=ORANGE
D5 "SML-311DTT86" LED_0603 5519.78,3977 r90 top value=ORANGE
D6 "SML-311DTT86" LED_0603 5627,3977 r90 top value=ORANGE
D7 "MBRB4030T4G" DIO_SCHOTTKY_MBRB4030T4G 1249,3430 r90 top value="Vf = 550mV @ 40A"
D8 "SMLVT3V3" TVS_POW_SMLVT3V3 5521,3205 r0 top value="Vbr = 4.1V -  Clamp = 10.3V"
D9 "SMLVT3V3" TVS_POW_SMLVT3V3 5529.39,3599.25 r0 top value="Vbr = 4.1V -  Clamp = 10.3V"
D10 "SML-311UTT86" LED_0603 1555.41,2881.33 r270 top value=RED
D11 "SMBJ24CA" TVS_PWR_SMBJ36CA 195.69,2176 r90 bottom value="Vbr = 26.7V -  Clamp = 38.9V"
D12 "SMBJ24CA" TVS_PWR_SMBJ36CA 399,2177 r90 bottom value="Vbr = 26.7V -  Clamp = 38.9V"
D13 "SMBJ24CA" TVS_PWR_SMBJ36CA 593,2177 r90 bottom value="Vbr = 26.7V -  Clamp = 38.9V"
D14 "SMBJ24CA" TVS_PWR_SMBJ36CA 791.28,2178 r90 bottom value="Vbr = 26.7V -  Clamp = 38.9V"
D15 "SMBJ24CA" TVS_PWR_SMBJ36CA 964.13,2418.78 r90 bottom value="Vbr = 26.7V -  Clamp = 38.9V"
D16 "SMBJ5.0CA" TVS_PWR_SMBJ5.0CA 4013.31,1466.25 r270 top value="Vbr = 6.4V -  Clamp = 9.2V"
D17 "SMBJ5.0CA" TVS_PWR_SMBJ5.0CA 3229.31,1504.25 r270 top value="Vbr = 6.4V -  Clamp = 9.2V"
D18 "SMBJ5.0CA" TVS_PWR_SMBJ5.0CA 4949.13,1366.78 r270 top value="Vbr = 6.4V -  Clamp = 9.2V"
D19 "SMBJ5.0CA" TVS_PWR_SMBJ5.0CA 4537.13,1343.78 r270 top value="Vbr = 6.4V -  Clamp = 9.2V"
F1 "0154005.DR" FUS_0154XXX.DR 1348.13,2890.54 r90 top value="5A 125V AC/DC FAST"
FID1 "FID 1MM" FID_CIRCLE_1MM 644,4075 r0 top
FID2 "FID 1MM" FID_CIRCLE_1MM 889.51,2920 r0 top
FID3 "FID 1MM" FID_CIRCLE_1MM 6026,1711 r0 top
ISO1 "ADUM3160BRWZ-RL" ISO_ADUM3160BRWZ-RL 5504.13,1862.78 r90 top value="2500Vrms voltage isolation"
J1 "10118194-0001LF" CON_USB_10118194-0001LF 5622.31,1297.48 r0 top value="USB - Micro B"
J2 "RJHSE-5385" CONN_ETHERNET_RJHSE-5385 2089.57,2057.18 r0 top
J3 "5-1814832-1" CONN_SMA_5-1814832-1 5191.12,1363.78 r0 top
J4 "5-1814832-1" CONN_SMA_5-1814832-1 4292.12,1363.78 r0 top
J5 "5-1814832-1" CONN_SMA_5-1814832-1 3773.31,1347.26 r0 top
J6 "5-1814832-1" CONN_SMA_5-1814832-1 3465.51,1347.25 r0 top
J7 "OSTTC040162" CONN_TERMINAL_OSTTA040161 496,1946 r0 top
J8 "0039300060" CON_MINIFIT_0039300060 1348.13,2129.78 r180 top
L1 "FER - 0402" FER_0402 1774.57,3103.26 r180 top value=1k
L2 "FER - 0402" FER_0402 1978.65,3966.69 r90 top value=1k
L3 "FER - 0402" FER_0402 2121.65,3974.19 r90 top value=1k
L4 "120nH" FP-0603HP-MFG 3801.31,2015.25 r270 top
L5 "120nH" FP-0603HP-MFG 3720.43,2015.25 r270 top
L6 "120nH" FP-0603HP-MFG 3465.51,2013.25 r270 top
L7 "120nH" FP-0603HP-MFG 3546.51,2013.25 r270 top
L8 "120nH" FP-0603HP-MFG 4767.13,1875.78 r90 top
L9 "120nH" FP-0603HP-MFG 4849.13,1875.78 r90 top
L10 "120nH" FP-0603HP-MFG 4570.13,1875.22 r90 top
L11 "120nH" FP-0603HP-MFG 4651.13,1875.78 r90 top
M1 "410-357-B" MOD_JTAG_410-357-B 5608.13,2620.78 r90 top
R1 "RES - 0402" RES_0402 4704.98,3302.29 r0 top value=40.2
R2 "RES - 0402" RES_0402 4774.98,3227.29 r0 top value=40.2
R3 "RES - 0402" RES_0402 4775.48,3177.29 r0 top value=40.2
R4 "RES - 0402" RES_0402 4704.98,3352.29 r0 top value=40.2
R5 "RES - 0402" RES_0402 4774.98,3277.29 r0 top value=40.2
R6 "RES - 0402" RES_0402 4704.98,3252.29 r0 top value=40.2
R7 "RES - 0402" RES_0402 4704.98,3202.7 r0 top value=40.2
R8 "RES - 0402" RES_0402 4704.98,3152.25 r0 top value=40.2
R9 "RES - 0402" RES_0402 4774.98,3075.7 r0 top value=40.2
R10 "RES - 0402" RES_0402 4704.98,3102.56 r0 top value=40.2
R11 "RES - 0402" RES_0402 4704.98,3452.29 r0 top value=40.2
R12 "RES - 0402" RES_0402 4774.98,3127.29 r0 top value=40.2
R13 "RES - 0402" RES_0402 4774.98,3327.29 r0 top value=40.2
R14 "RES - 0402" RES_0402 4704.98,3052.29 r0 top value=40.2
R15 "RES - 0402" RES_0402 4774.98,3427.29 r0 top value=40.2
R16 "RES - 0402" RES_0402 4774.98,3377.29 r0 top value=40.2
R17 "RES - 0402" RES_0402 4704.98,3402.29 r0 top value=40.2
R18 "RES - 0402" RES_0402 2276.77,3226.68 r0 top value=1k
R19 "RES - 0402" RES_0402 4704.98,3604.22 r0 top value=40.2
R20 "RES - 0402" RES_0402 4774.98,3477.29 r0 top value=40.2
R21 "RES - 0402" RES_0402 4774.98,3577.29 r0 top value=40.2
R22 "RES - 0402" RES_0402 4774.98,3527.29 r0 top value=40.2
R23 "RES - 0402" RES_0402 4704.98,3501.52 r0 top value=40.2
R24 "RES - 0402" RES_0402 4704.98,3551.96 r0 top value=40.2
R25 "RES - 0402" RES_0402 4257.48,3085.86 r0 top value=4.7k
R26 "RES - 0402" RES_0402 4368.03,3384.94 r90 bottom value=40.2
R27 "RES - 0402" RES_0402 4367.55,3310.32 r90 bottom value=40.2
R28 "RES - 0402" RES_0402 4510.48,3351.59 r0 bottom value=240
R29 "RES - 0402" RES_0402 4704.98,3647.22 r0 top value=100
R30 "RES - 0402" RES_0402 4409.98,4047.22 r180 top value=10k
R31 "RES - 0402" RES_0402 4387.98,3813.22 r90 top value=10k
R32 "RES - 0402" RES_0402 4334.48,3831.22 r180 top value=10k
R33 "RES - 0402" RES_0402 4550.48,2791.02 r0 bottom value=20
R34 "RES - 0402" RES_0402 4185.63,2810.27 r270 top value=100
R35 "RES - 0402" RES_0402 4130,2828 r0 top value=100
R36 "RES - 0402" RES_0402 3291.98,3558.3 r270 bottom value=4.7k
R37 "RES - 0402" RES_0402 3380.51,3726.68 r180 bottom value=4.7k
R38 "RES - 0402" RES_0402 2632.48,3688.74 r0 top value=330
R39 "RES - 0402" RES_0402 4622.06,2721.51 r270 top value=2.4k
R40 "RES - 0402" RES_0402 5133.13,2052.78 r180 top value=4.7k
R41 "RES - 0402" RES_0402 5171.13,2090.78 r180 top value=10k
R42 "RES - 0402" RES_0402 5629.13,1584.78 r270 top value=24
R43 "RES - 0402" RES_0402 5550.13,2115.78 r180 top value=24
R44 "RES - 0402" RES_0402 5577.13,1584.28 r270 top value=24
R45 "RES - 0402" RES_0402 5667.13,2115.78 r0 top value=24
R46 "RES - 0603" RES_0603 5715.13,1478.78 r0 top value=0
R47 "RES - 0402" RES_0402 2287.57,2392.18 r0 top value=220
R48 "RES - 0402" RES_0402 2521.57,2310.18 r180 top value=1k
R49 "RES - 0402" RES_0402 1804.07,2565.18 r0 top value=75
R50 "RES - 0402" RES_0402 1804.07,2510.18 r0 top value=75
R51 "RES - 0402" RES_0402 1925.56,2463.26 r0 top value=75
R52 "RES - 0402" RES_0402 1925.56,2410.26 r0 top value=75
R53 "RES - 0402" RES_0402 4124.98,3824.22 r0 bottom value=10k
R54 "RES - 0402" RES_0402 2222.65,3533.83 r270 top value=20
R55 "RES - 0402" RES_0402 1659.57,3766.72 r180 top value=90.9k
R56 "RES - 0402" RES_0402 1733.13,3766.72 r180 top value=12.1k
R57 "RES - 0402" RES_0402 1790.01,3254.76 r0 top value=10k
R58 "RES - 0402" RES_0402 3381.13,3688.78 r180 bottom value=10k
R59 "RES - 0402" RES_0402 4662.13,2154.78 r180 bottom value=49.9
R60 "RES - 0402" RES_0402 4736.63,2154.78 r180 bottom value=49.9
R61 "RES - 0402" RES_0402 4743.65,1490.72 r0 top value=1k
R62 "RES - 0402" RES_0402 4802.71,1530.28 r0 top value=499
R63 "RES - 0402" RES_0402 4875.13,1530.28 r180 top value=49.9
R64 "RES - 0402" RES_0402 3769.94,1659.37 r90 top value=1k
R65 "RES - 0402" RES_0402 3653.31,2105.25 r270 top value=10k
R66 "RES - 0402" RES_0402 4897.13,1587.78 r180 top value=499
R67 "RES - 0402" RES_0402 4861.76,1625.25 r0 top value=1k
R68 "RES - 0402" RES_0402 4598.13,1605.57 r270 top value=1k
R69 "RES - 0402" RES_0402 4558.13,1569.78 r270 top value=499
R70 "RES - 0402" RES_0402 4598.13,2044.28 r270 top value=49.9
R71 "RES - 0402" RES_0402 3801.31,1890.25 r90 top value=499
R72 "RES - 0402" RES_0402 3978.31,2275.25 r270 top value=49.9
R73 "RES - 0402" RES_0402 4598.38,1532.28 r90 top value=49.9
R74 "RES - 0402" RES_0402 4635.13,2044.78 r270 top value=49.9
R75 "RES - 0402" RES_0402 3769.94,1584.75 r90 top value=44.2
R76 "RES - 0402" RES_0402 3715.31,1893.25 r90 top value=499
R77 "RES - 0402" RES_0402 3720.43,2086.75 r0 top value=25
R78 "RES - 0402" RES_0402 3801.31,2086.75 r180 top value=25
R79 "RES - 0402" RES_0402 3696.31,1834.25 r0 top value=1k
R80 "RES - 0402" RES_0402 3466.31,1694.25 r90 top value=1k
R81 "RES - 0402" RES_0402 3465.51,1893.25 r90 top value=499
R82 "RES - 0402" RES_0402 3466.31,1619.25 r90 top value=44.2
R83 "RES - 0402" RES_0402 3550.31,1891.25 r90 top value=499
R84 "RES - 0402" RES_0402 3546.51,2084.75 r180 top value=25
R85 "RES - 0402" RES_0402 3465.51,2084.75 r0 top value=25
R86 "RES - 0402" RES_0402 3567.82,1834.25 r180 top value=1k
R87 "RES - 0402" RES_0402 4790.13,2045.78 r270 top value=49.9
R88 "RES - 0402" RES_0402 4828.13,2045.78 r270 top value=49.9
R89 "RES - 0402" RES_0402 4648.13,1473.78 r90 top value=499
R90 "RES - 0402" RES_0402 4690.6,1514.78 r270 top value=1k
R91 "RES - 0402" RES_0402 3978.31,2346.75 r270 top value=49.9
R92 "RES - 0402" RES_0402 437,3384 r270 top value=10k
R93 "RES - 0402" RES_0402 476,3406 r270 top value=10k
R94 "RES - 0603" RES_0603 616.69,3618 r180 top value=100mOhms
R95 "RES - 0402" RES_0402 395,3517 r90 top value=10k
R96 "RES - 0402" RES_0402 433,3474 r90 top value=10k
R97 "RES - 0603" RES_0603 585.19,3150 r180 top value=100mOhms
R98 "RES - 0402" RES_0402 554,3399 r180 bottom value=4.7k
R99 "RES - 0402" RES_0402 553.69,3362.12 r180 bottom value=4.7k
R100 "RES - 0402" RES_0402 4863.5,4252.03 r180 top value=750
R101 "RES - 0402" RES_0402 5039,4146 r180 top value=750
R102 "RES - 0402" RES_0402 5519.78,3814 r270 top value=750
R103 "RES - 0402" RES_0402 5622,3815 r270 top value=750
R104 "RES - 0402" RES_0402 4672.73,4269 r90 top value=100k
R105 "RES - 0402" RES_0402 5426,3317.59 r0 top value=10k
R106 "RES - 0402" RES_0402 5425,3716 r0 top value=10k
R107 "RES - 0603" RES_0603 1555.41,3011.28 r90 top value=11.1k
R108 "RES - 0402" RES_0402 1837.65,3483.19 r180 top value=1k
R109 "RES - 0402" RES_0402 2205.15,3806.19 r180 top value=1k
R110 "RES - 0402" RES_0402 1862.65,3434.19 r180 top value=1k
R111 "RES - 0402" RES_0402 1929.65,3939.19 r270 top value=1k
R112 "RES - 0402" RES_0402 4634.98,4268.72 r90 top value=100k
R113 "RES - 0402" RES_0402 4235.98,4343.22 r180 top value=1.21k
R114 "RES - 0402" RES_0402 4112.98,3665.22 r0 top value=4.12k
R115 "RES - 0402" RES_0402 4041.98,3664.22 r0 top value=4.75k
R116 "RES - 0402" RES_0402 5268.13,2543.65 r0 bottom value=4.75k
R117 "RES - 0402" RES_0402 4044.73,2637.41 r90 top value=3.57k
R118 "RES - 0402" RES_0402 4028.86,2558.91 r90 top value=1.15k
R119 "RES - 0402" RES_0402 3332.53,4134.61 r90 top value=12.1k
R120 "RES - 0402" RES_0402 4151.13,2254.28 r90 bottom value=174k
R121 "RES - 0402" RES_0402 4168.13,2194.78 r180 bottom value=11.5k
R122 "RES - 0402" RES_0402 4343.13,2079.28 r0 top value=90.9k
R123 "RES - 0402" RES_0402 1793.79,4243.22 r90 top value=10k
R124 "RES - 0402" RES_0402 1793.79,4325.72 r90 top value=53k
R125 "RES - 1206" RES_1206 4194.13,1665.78 r180 top value=332k
R126 "RES - 0805" RES_0805 4366.43,1668.07 r180 top value=102k
R127 "RES - 0603" RES_0603 2855.01,2156.94 r0 bottom value=65.7k
R128 "RES - 0402" RES_0402 2753.01,2156.94 r0 bottom value=10k
R129 "RES - 0402" RES_0402 687,3772 r0 top value=10k
R130 "RES - 0402" RES_0402 721,3871 r270 top value=10k
R131 "RES - 0402" RES_0402 5782,3313 r0 top value=10k
R132 "RES - 0402" RES_0402 5816,3416 r270 top value=10k
R133 "RES - 0402" RES_0402 3372.65,1799.34 r270 top value=25.5k
R134 "RES - 0402" RES_0402 3372.65,1876.21 r270 top value=10k
R135 "RES - 0402" RES_0402 2851.01,2408.94 r90 top value=90.9k
R136 "RES - 0402" RES_0402 2850.01,2334.94 r90 top value=12.1k
S1 "B3SN-3012P" SWI_TACT_B3SN-3012P 4883.65,3962.86 r180 top value=SPST-NO
S2 "B3SN-3012P" SWI_TACT_B3SN-3012P 5257.63,3353.86 r270 top value=SPST-NO
S3 "B3SN-3012P" SWI_TACT_B3SN-3012P 5257,3805 r270 top value=SPST-NO
T1 "H1102NLT" TRANSFO_H1102NLT 2093.57,2768.18 r270 top value="1:1 (350uH)"
U1 "XC6SLX100-3FGG676C" FPGA_XILINX_FGG676 2986.22,3126.09 r180 top locked
U2 "MT41J128M16JT-125" MEM_DDR3_MT41J128M16JT-125 4378.19,3384.36 r0 top locked
U3 "TPS51200DRCT" REG_PMIC_TPS51200DRCT 4446.98,3940.22 r90 top value="DDR, DDR2, DDR3(L), DDR4"
U4 "M25P128-VME6TGB" MICT-VDFPN-8_M 4408.63,2814.01 r180 top
U5 "KSZ8091MNXCA" COM_ETH_PHY_KSZ8091MNXCA 2101.77,3249.18 r90 top
U6 "SI8620BB-B-IS" ISO_SI8620BB-B-IS 5160.13,1861.78 r90 top
U7 "AD9146BCPZ" DAC_AD9146BCPZ 3623.13,2365.78 r180 top
U8 "ADS62P48IRGCT" ADC_ADS62P48IRGCT 4714.13,2287.78 r0 top
U9 "ADA4927-2YCPZ-R2" OPAMP_ADA4927-2YCPZ-R2 4720.13,1654.78 r90 top
U10 "DRV8811PWPR" POW_MOTOR_DRV8811PWPR 660,3381 r0 top
U11 "AD8056ARMZ" OPAMP_AD8056ARMZ 3623.28,1697.75 r180 top
U12 "CDCE62005RGZT" TIM_CDCE62005RGZT 1969.01,3700.01 r90 top
U13 "TPS3808G01DBVR" POW_RESET_TPS3808 4704,4170 r90 top
U14 "NCP59744MN1ADJTBG" REG_LDO_NCP59744MN1ADJTBG 4106.61,3754.41 r270 top value="0.8V ~ 3.6V"
U15 "PTH04T231WAZ" REG_SWR_PTH04T231WAZ 5325.13,2124.78 r90 bottom value="0.69 - 3.6V (Out)"
U16 "PTH08T241WAZ" REG_SWR_PTH08T241WAZ 2830,4157 r0 top
U17 "PTH04T231WAZ" REG_SWR_PTH04T231WAZ 3774.96,4396.22 r0 top value="0.69 - 3.6V (Out)"
U18 "LMZ34002RKGR" REG_SWR_LMZ34002RKGR 4260.13,2343.78 r90 top value="-3 ~ -17V"
U19 "NCP59744MN1ADJTBG" REG_LDO_NCP59744MN1ADJTBG 3920,2624.64 r0 top value="0.8V ~ 3.6V"
U20 "TPS7A3301RGWR" REG_LDO_TPS7A3301RGWR 4234.78,1846.01 r0 top value=-1.18V~-33V
U21 "LMZ23610TZ/NOPB" NDY0011A_M 1272.13,4215.74 r180 top
U22 "LMZ23603TZE/NOPB" NDW0007A_V 3138.24,2316.94 r0 top
U23 "TC74A0-3.3VCTTR" SEN_TEMP_TC74A0-3.3VCTTR 619,3855 r0 top
U24 "TC74A0-3.3VCTTR" SEN_TEMP_TC74A0-3.3VCTTR 5715,3397 r0 top
U25 "TPS7A4701RGWR" REG_TPS7A4701RGWR 3164.38,1833.47 r180 top value="1.4 à 34V"
U26 "960-29-33-F-AB-0" 3960-29-33-F-AB-0 3721.83,2745.68 r90 top
Y1 "ASDMB-25.000MHZ-LC-T" OSC_ASDMB-25.000MHZ-LC-T 2289.98,3152.72 r90 top value=25MHz
Y2 "590BD-BDG" OSC_590BD-BDG 1802.65,3925.19 r270 bottom value="±7ppm (freq Stability), ±20ppm (freq stability total)"

## Footprints (in the part's own frame and the unit in brackets; to place one, negate y for a bottom-side part, rotate by r counter-clockwise, add the part's x,y. Pads: shape width x height; smd on the part's side, far side on the other; paste and mask are expansions set on the pad)
3960-29-33-F-AB-0 [mm]
  round 4.5 hole 3.5: 1(0,0) 1(23.14,35.85)
  body extent -3.45,-3.16 26.55,39.51, height 36.5
ADC_ADS62P48IRGCT [mm] "QFN, 64-Leads, Body 9,00x9,00mm, Pitch 0,50mm, Thermal Pad 7,40x7,40mm, IPC Medium Density"
  oval 0.8x0.23 smd mask+0.07: 1(-4.475,3.75) 2(-4.475,3.25) 3(-4.475,2.75) 4(-4.475,2.25) 5(-4.475,1.75) 6(-4.475,1.25) 7(-4.475,0.75) 8(-4.475,0.25) 9(-4.475,-0.25) 10(-4.475,-0.75) 11(-4.475,-1.25) 12(-4.475,-1.75) 13(-4.475,-2.25) 14(-4.475,-2.75) 15(-4.475,-3.25) 16(-4.475,-3.75) 33(4.475,-3.75) 34(4.475,-3.25) 35(4.475,-2.75) 36(4.475,-2.25) 37(4.475,-1.75) 38(4.475,-1.25) 39(4.475,-0.75) 40(4.475,-0.25) 41(4.475,0.25) 42(4.475,0.75) 43(4.475,1.25) 44(4.475,1.75) 45(4.475,2.25) 46(4.475,2.75) 47(4.475,3.25) 48(4.475,3.75)
  oval 0.23x0.8 smd mask+0.07: 17(-3.75,-4.475) 18(-3.25,-4.475) 19(-2.75,-4.475) 20(-2.25,-4.475) 21(-1.75,-4.475) 22(-1.25,-4.475) 23(-0.75,-4.475) 24(-0.25,-4.475) 25(0.25,-4.475) 26(0.75,-4.475) 27(1.25,-4.475) 28(1.75,-4.475) 29(2.25,-4.475) 30(2.75,-4.475) 31(3.25,-4.475) 32(3.75,-4.475) 49(3.75,4.475) 50(3.25,4.475) 51(2.75,4.475) 52(2.25,4.475) 53(1.75,4.475) 54(1.25,4.475) 55(0.75,4.475) 56(0.25,4.475) 57(-0.25,4.475) 58(-0.75,4.475) 59(-1.25,4.475) 60(-1.75,4.475) 61(-2.25,4.475) 62(-2.75,4.475) 63(-3.25,4.475) 64(-3.75,4.475)
  rect 7.4x7.4 smd mask+0.07: PAD(0,0)
  silkscreen extent -5.5,-4.72 4.72,4.72, body extent -4.57,-4.57 4.57,4.57, height 1
CAP_0402 [mil]
  rrect60% 20x20 smd: 1(-17.5,0) 2(17.5,0)
  silkscreen extent -32,-15 32,15, body extent -19,-10 20,10, height 20